# Altium PCB ALCT_MEZ_LX150T.PcbDoc (part 1 of 9)
Units mil, origin at the board's own origin, x right, y up, seen from the top; angles counter-clockwise.
Board outline 4101.98 x 5875.01 mil, 12 copper layers (Top Layer, Mid-Layer 1, +3V3, Mid-Layer 2, +1V2, Mid-Layer 4, +2V5, Mid-Layer 5, GND1, Mid-Layer 7, GND2, Bottom Layer), stack 64.7 mil thick; 378 components, 616 nets, 2492 pads, 1686 vias.
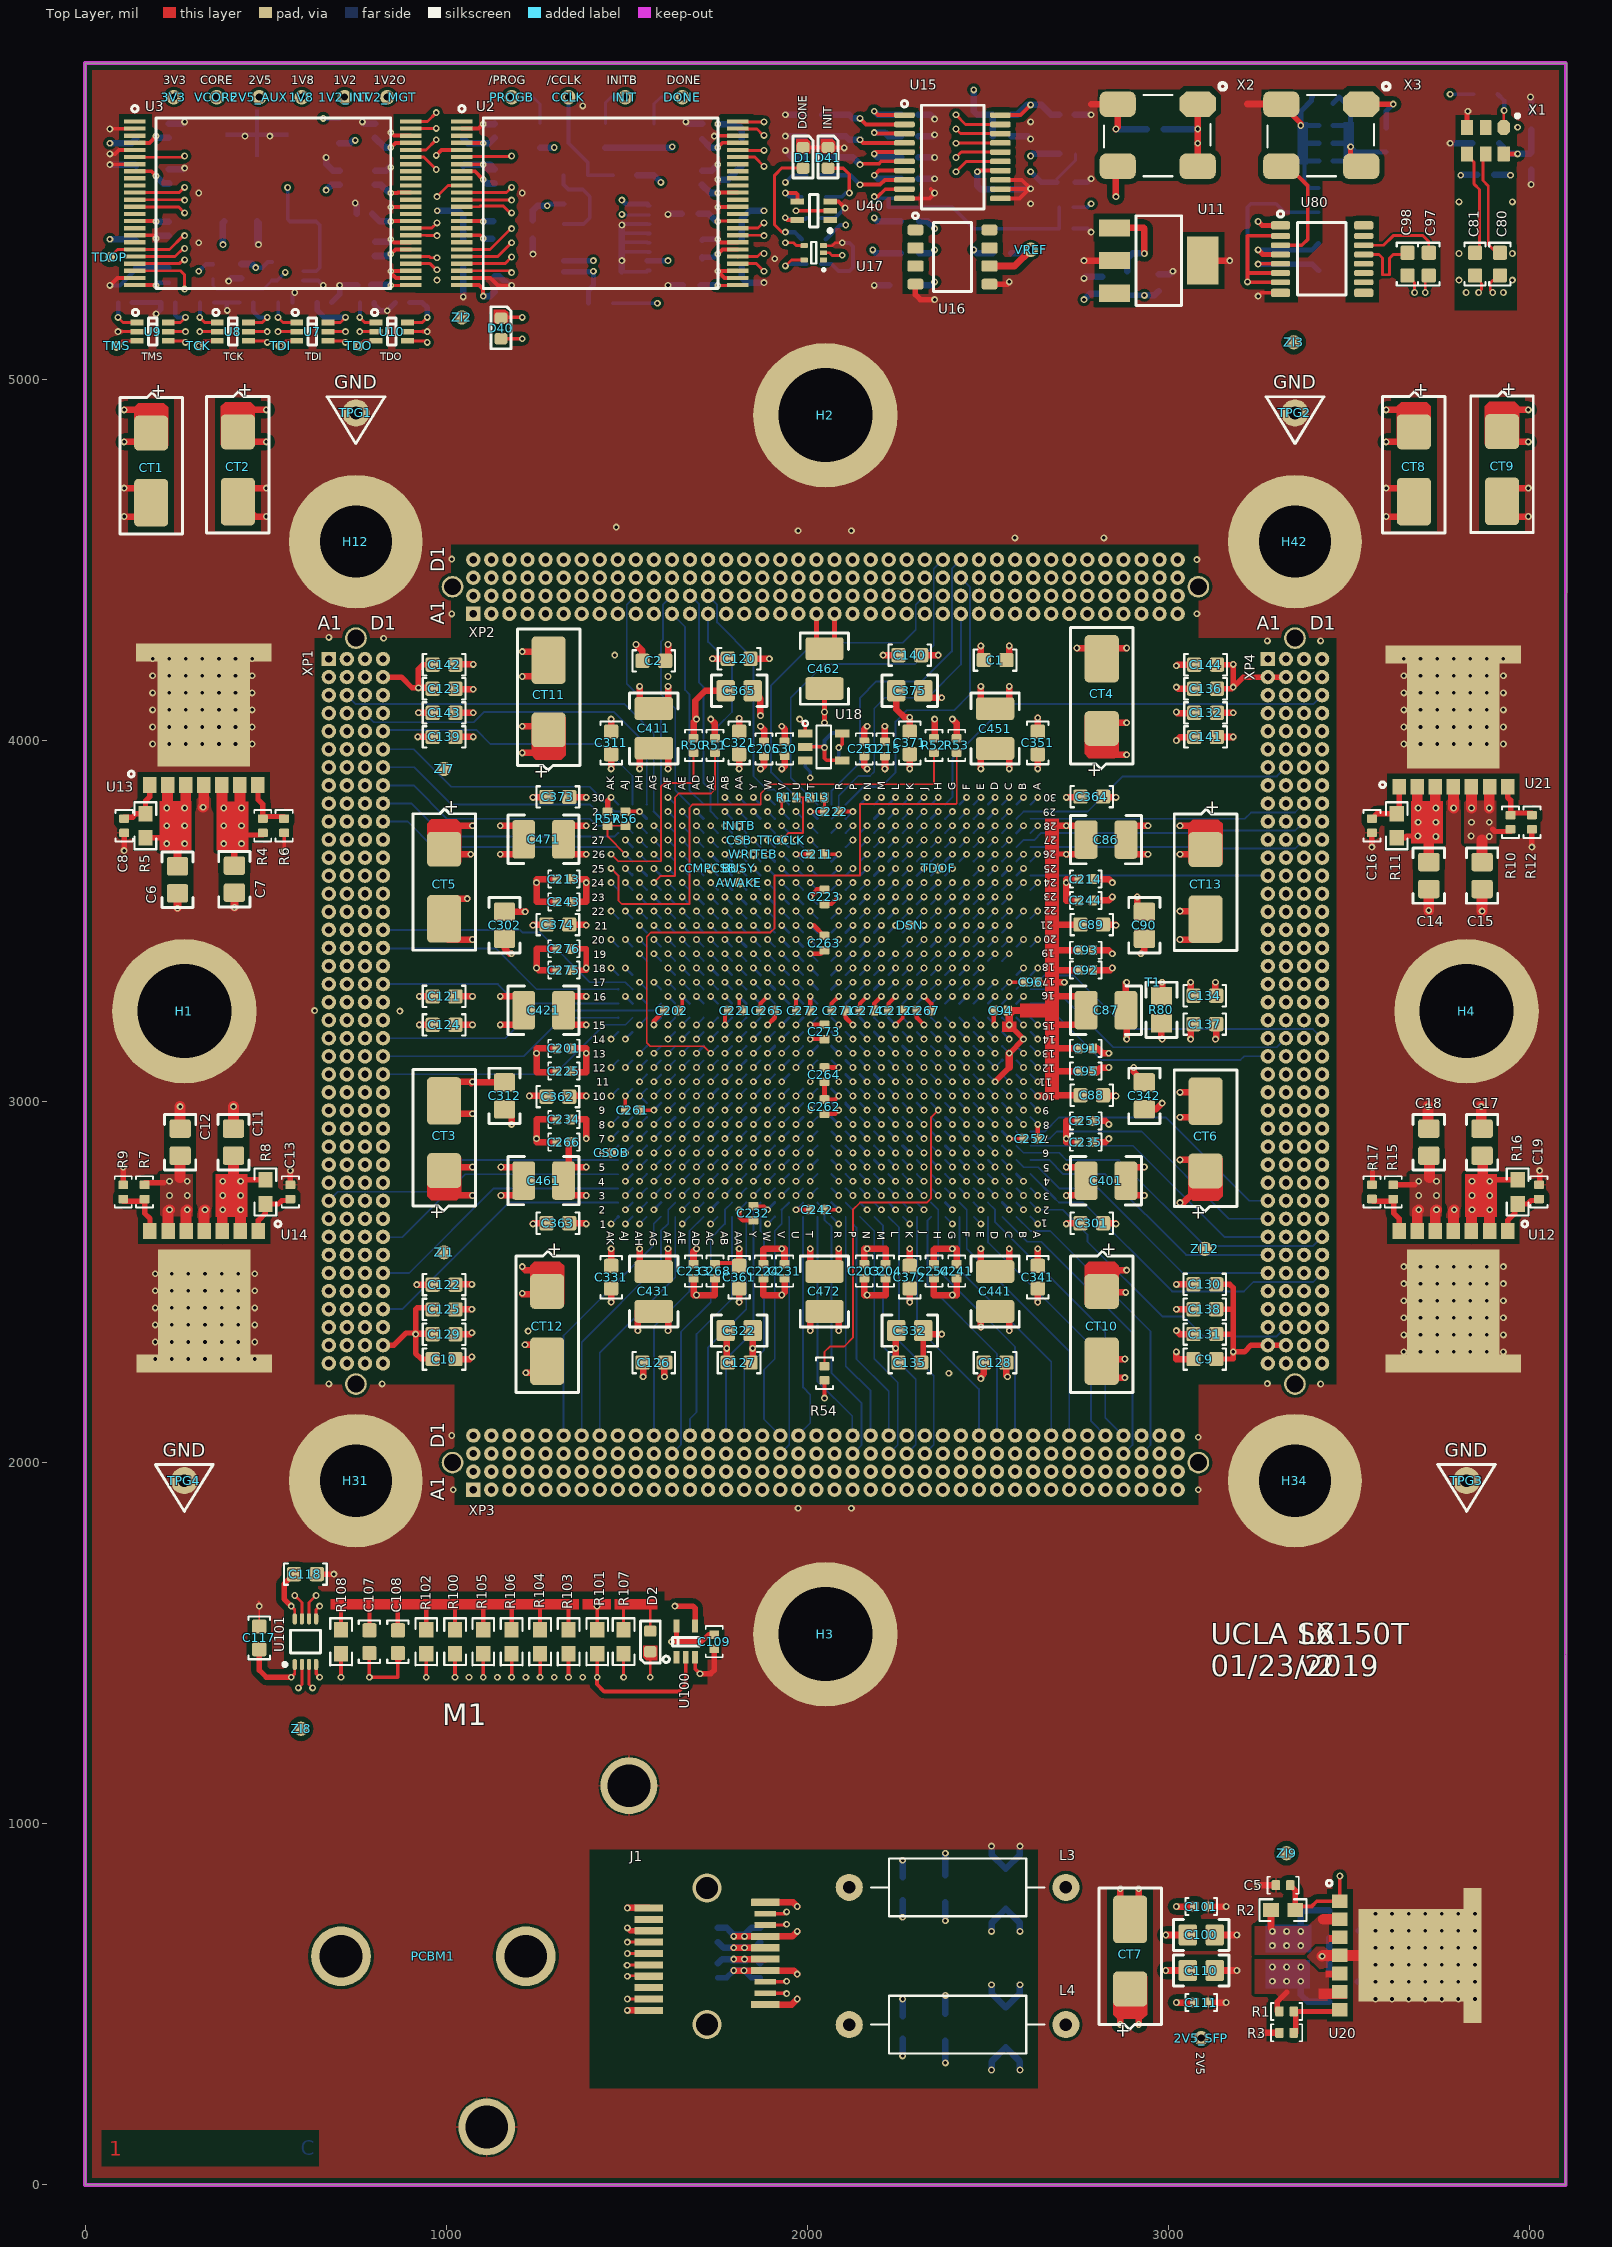
[diagram p0: Top Layer view]
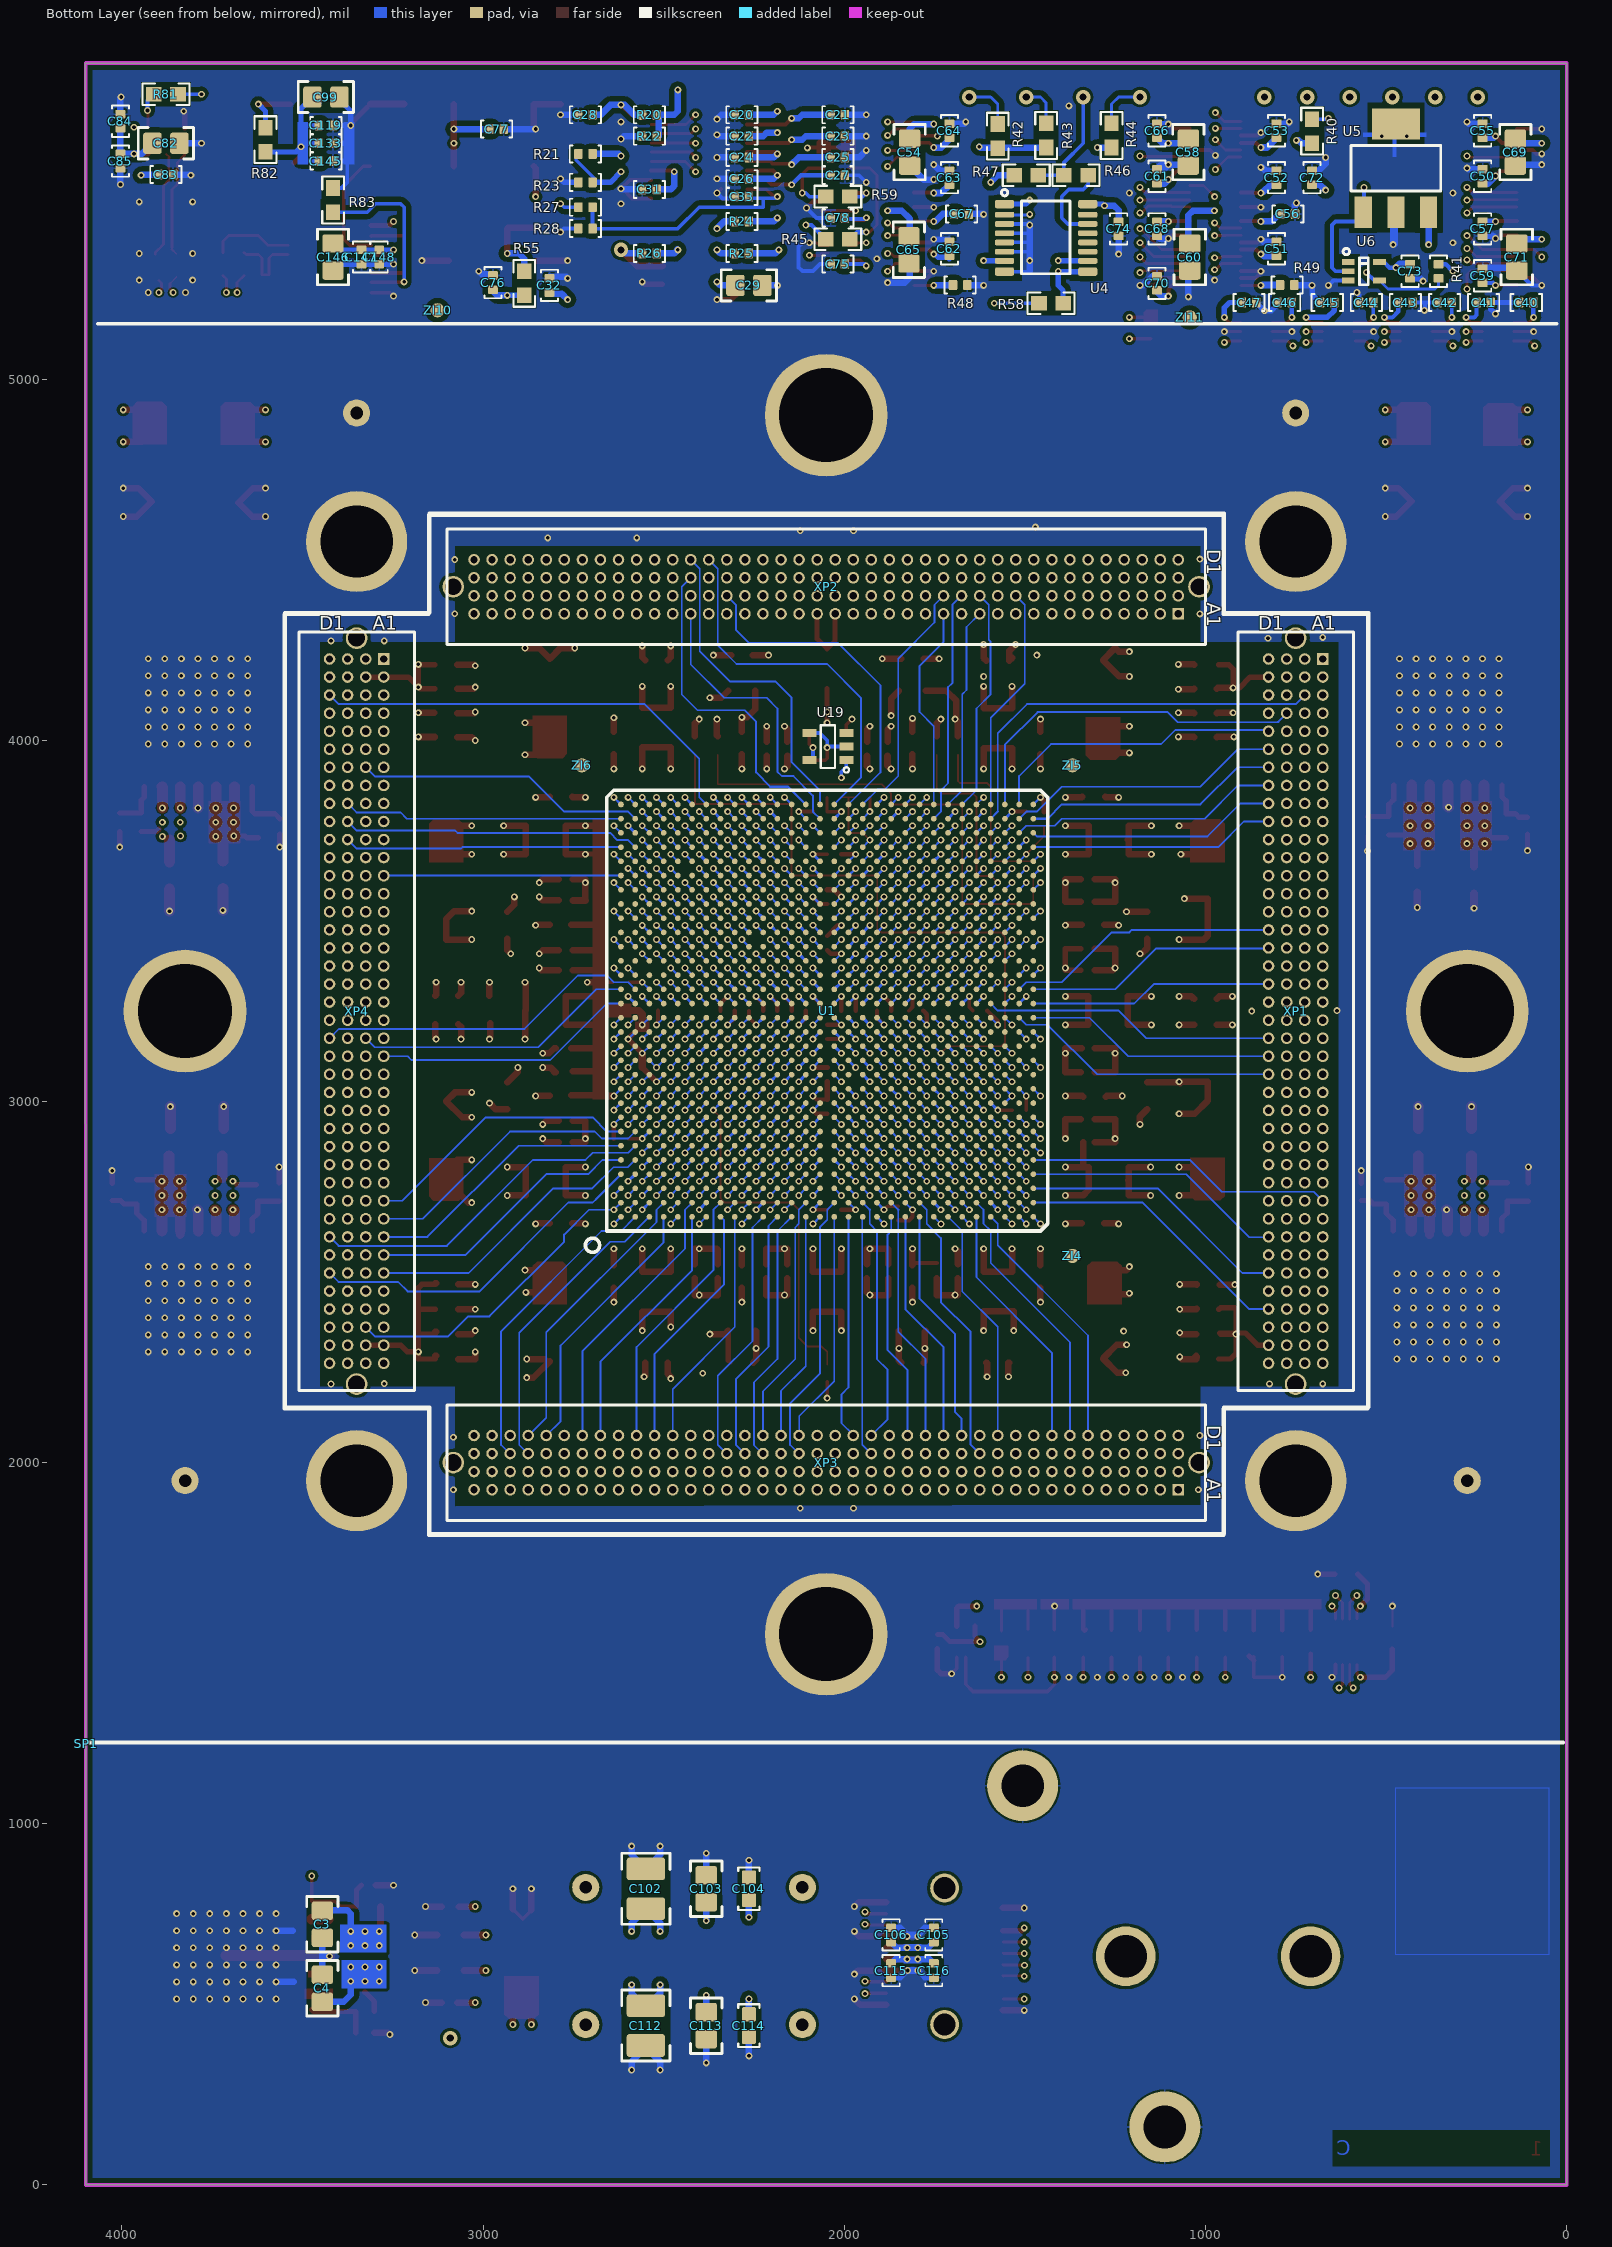
[diagram p1: Bottom Layer view, seen from below]
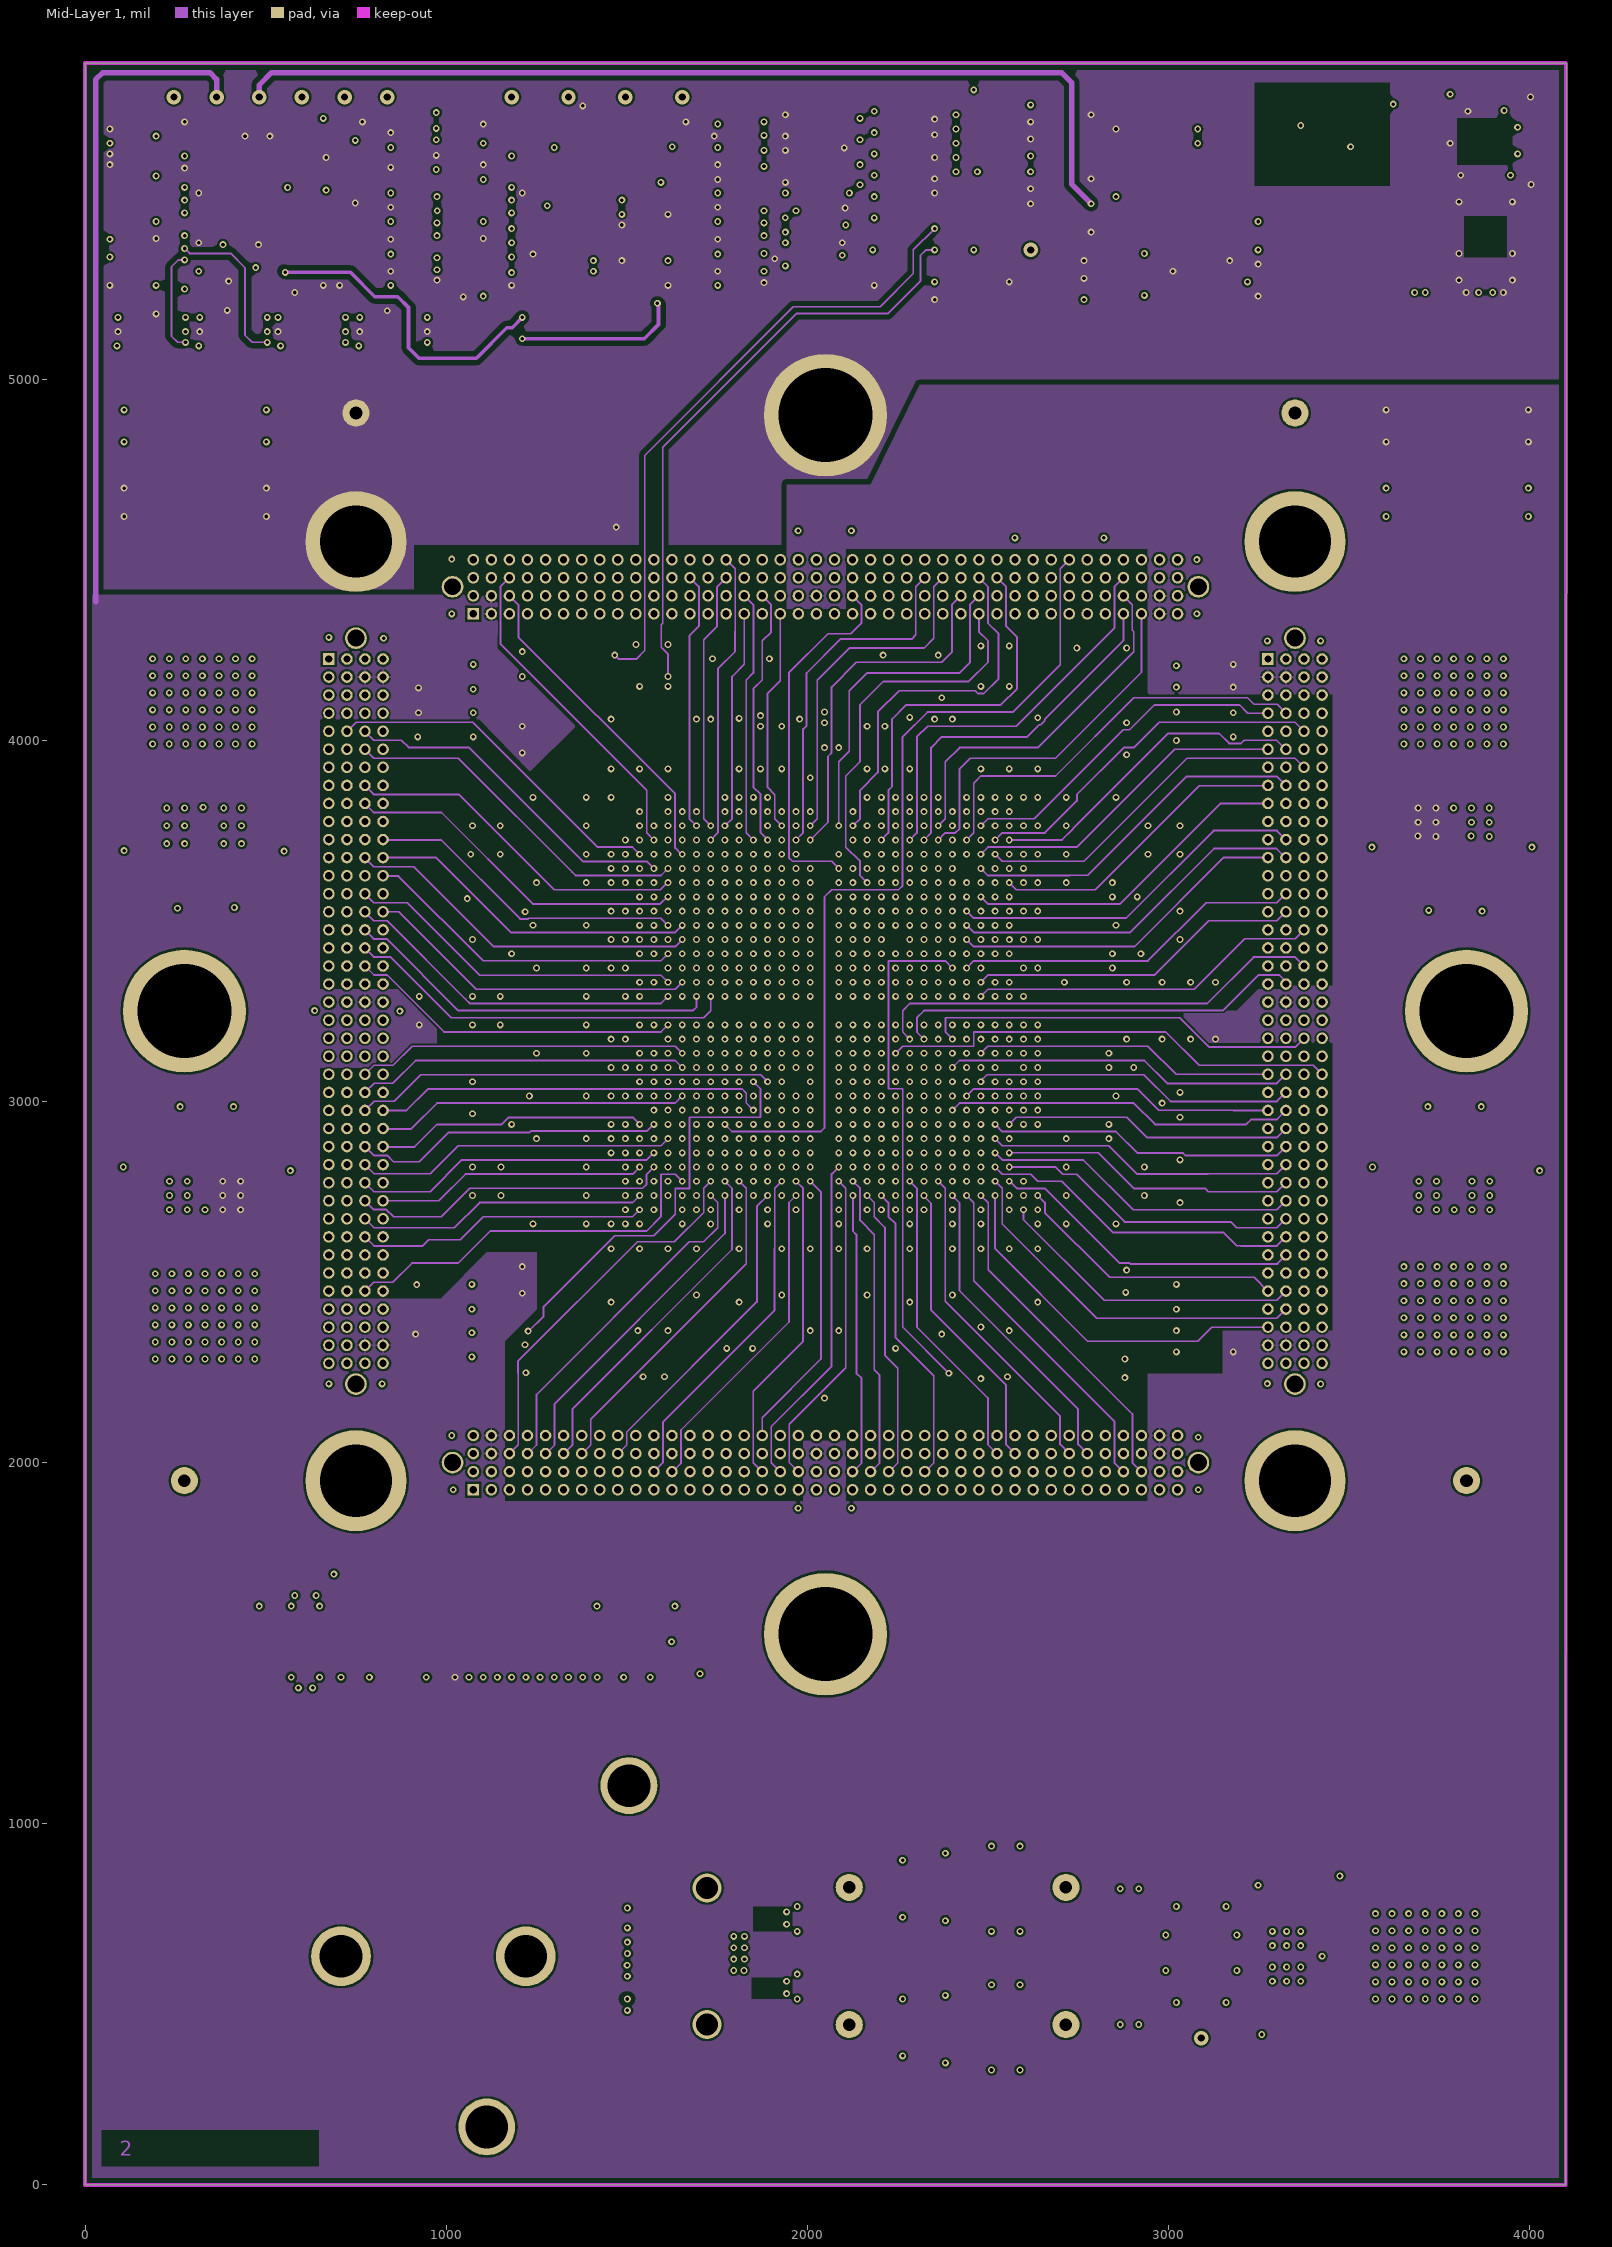
[diagram p2: Mid-Layer 1]
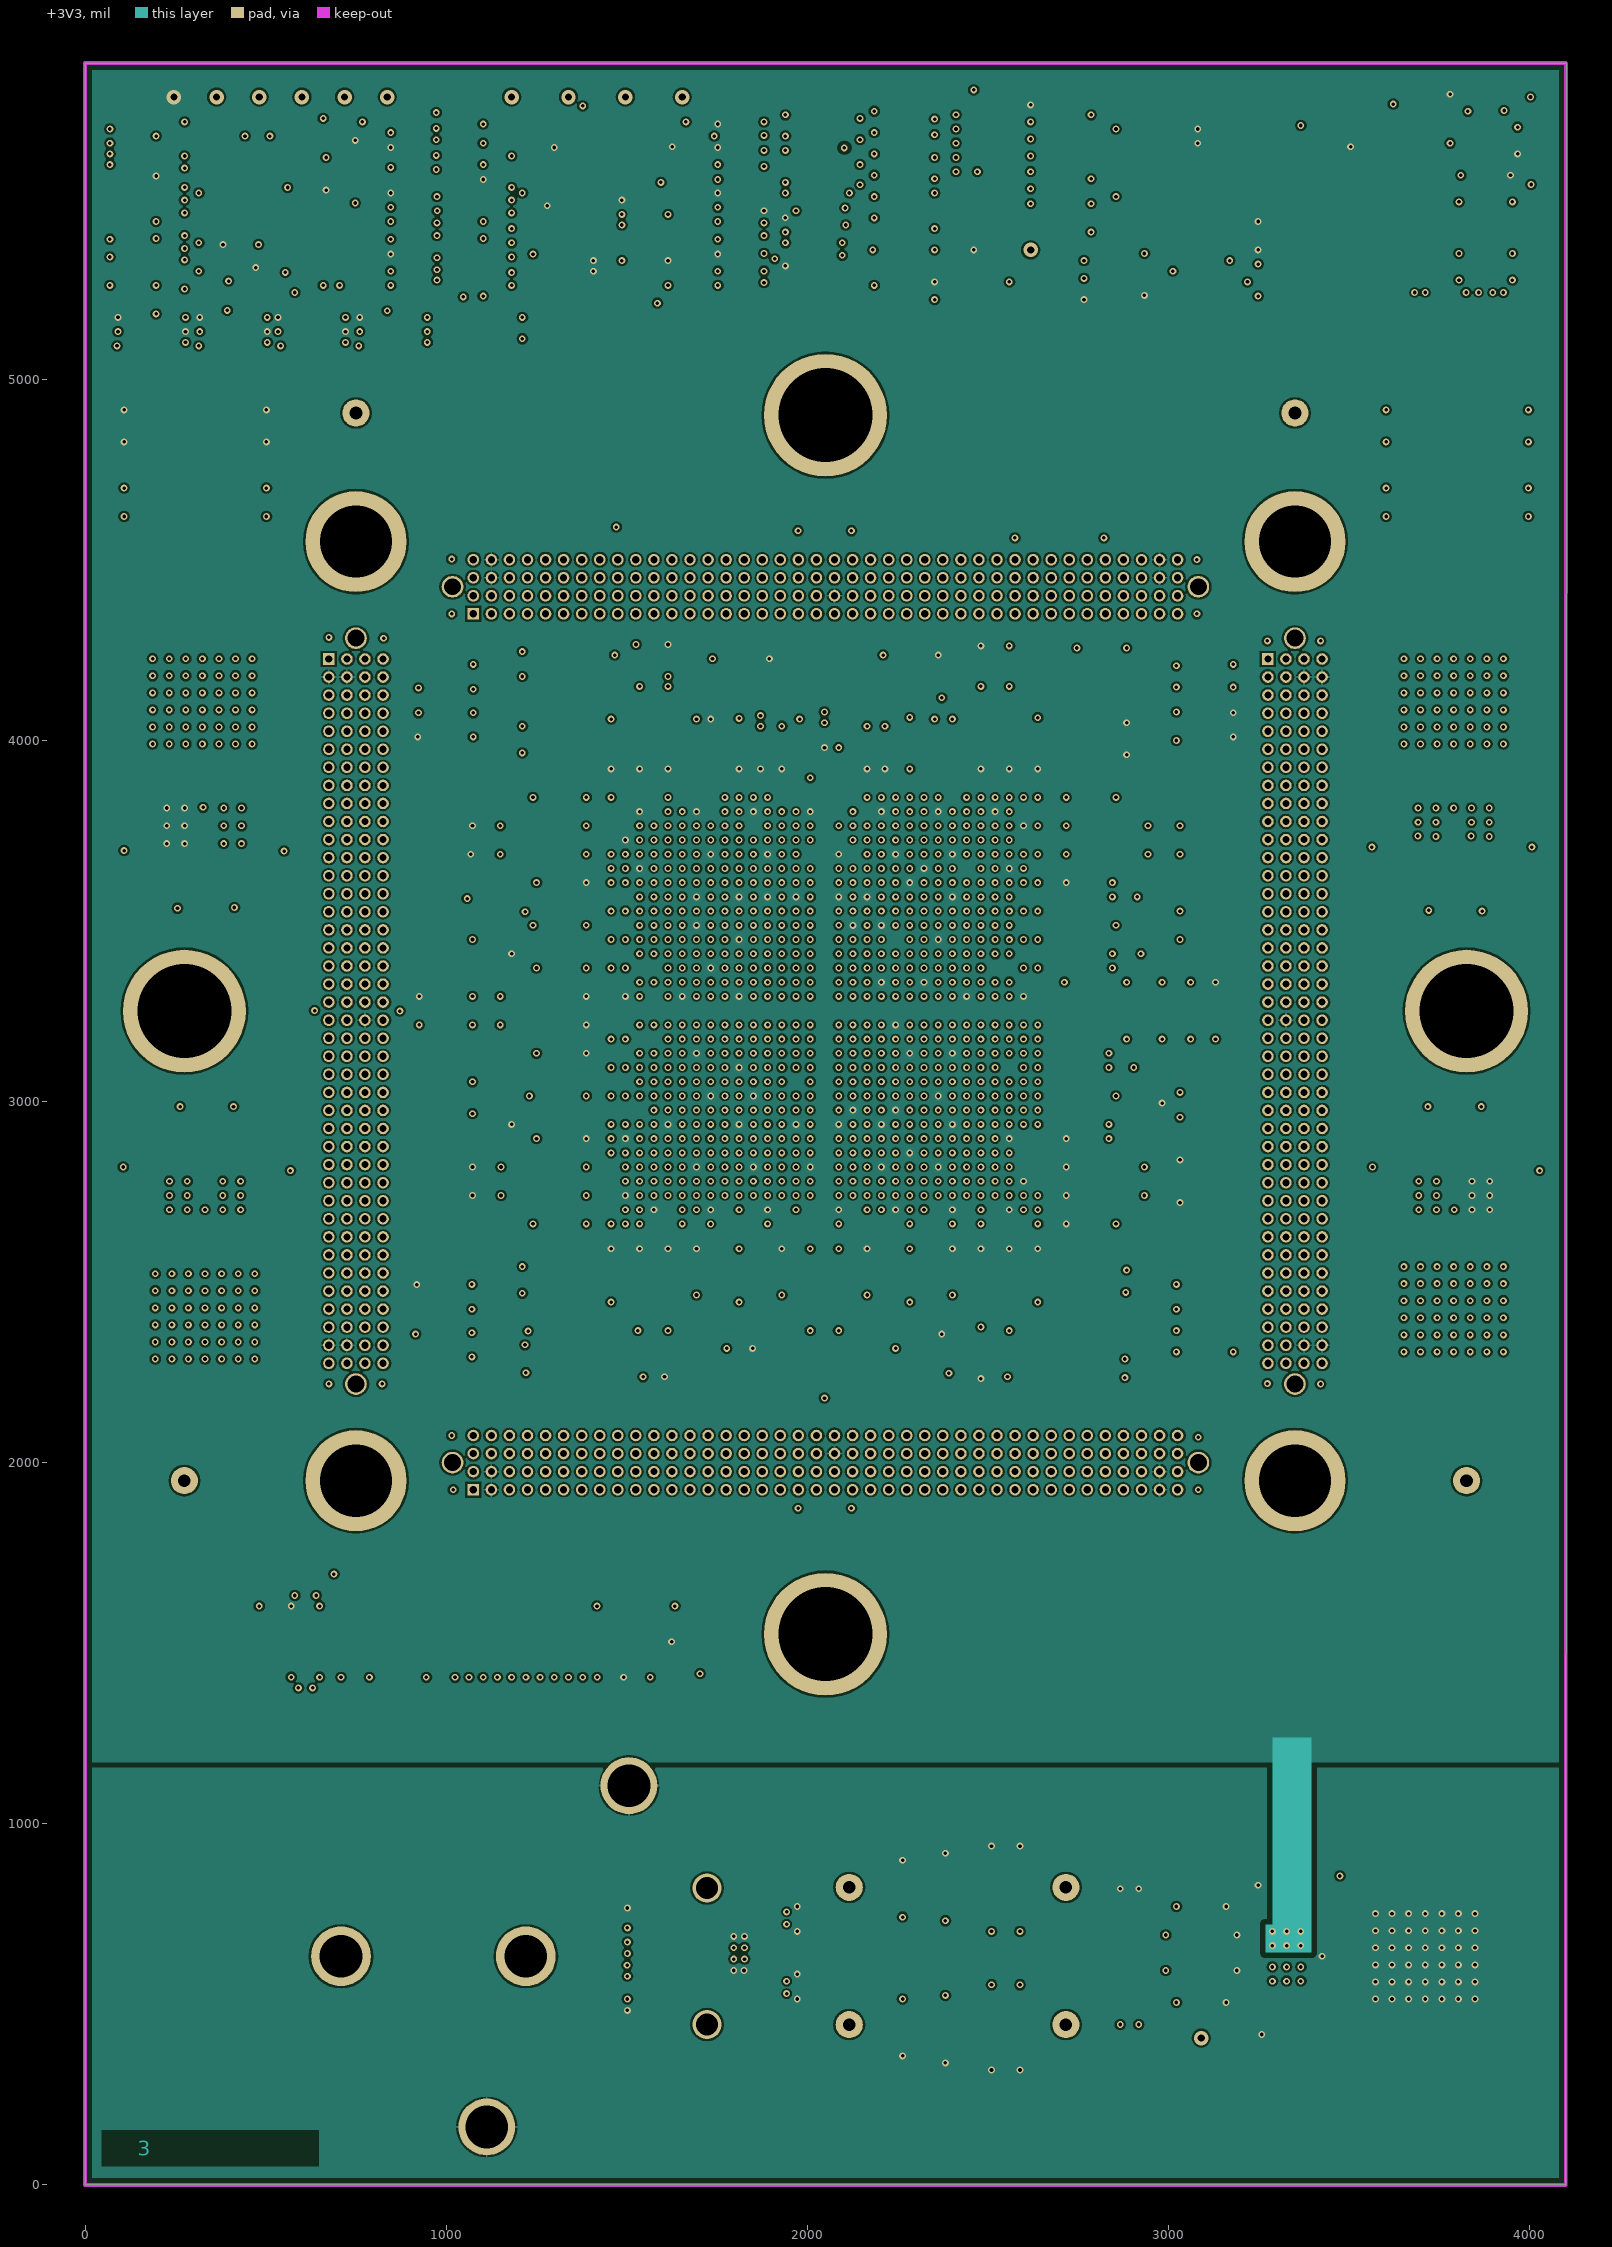
[diagram p3: +3V3]
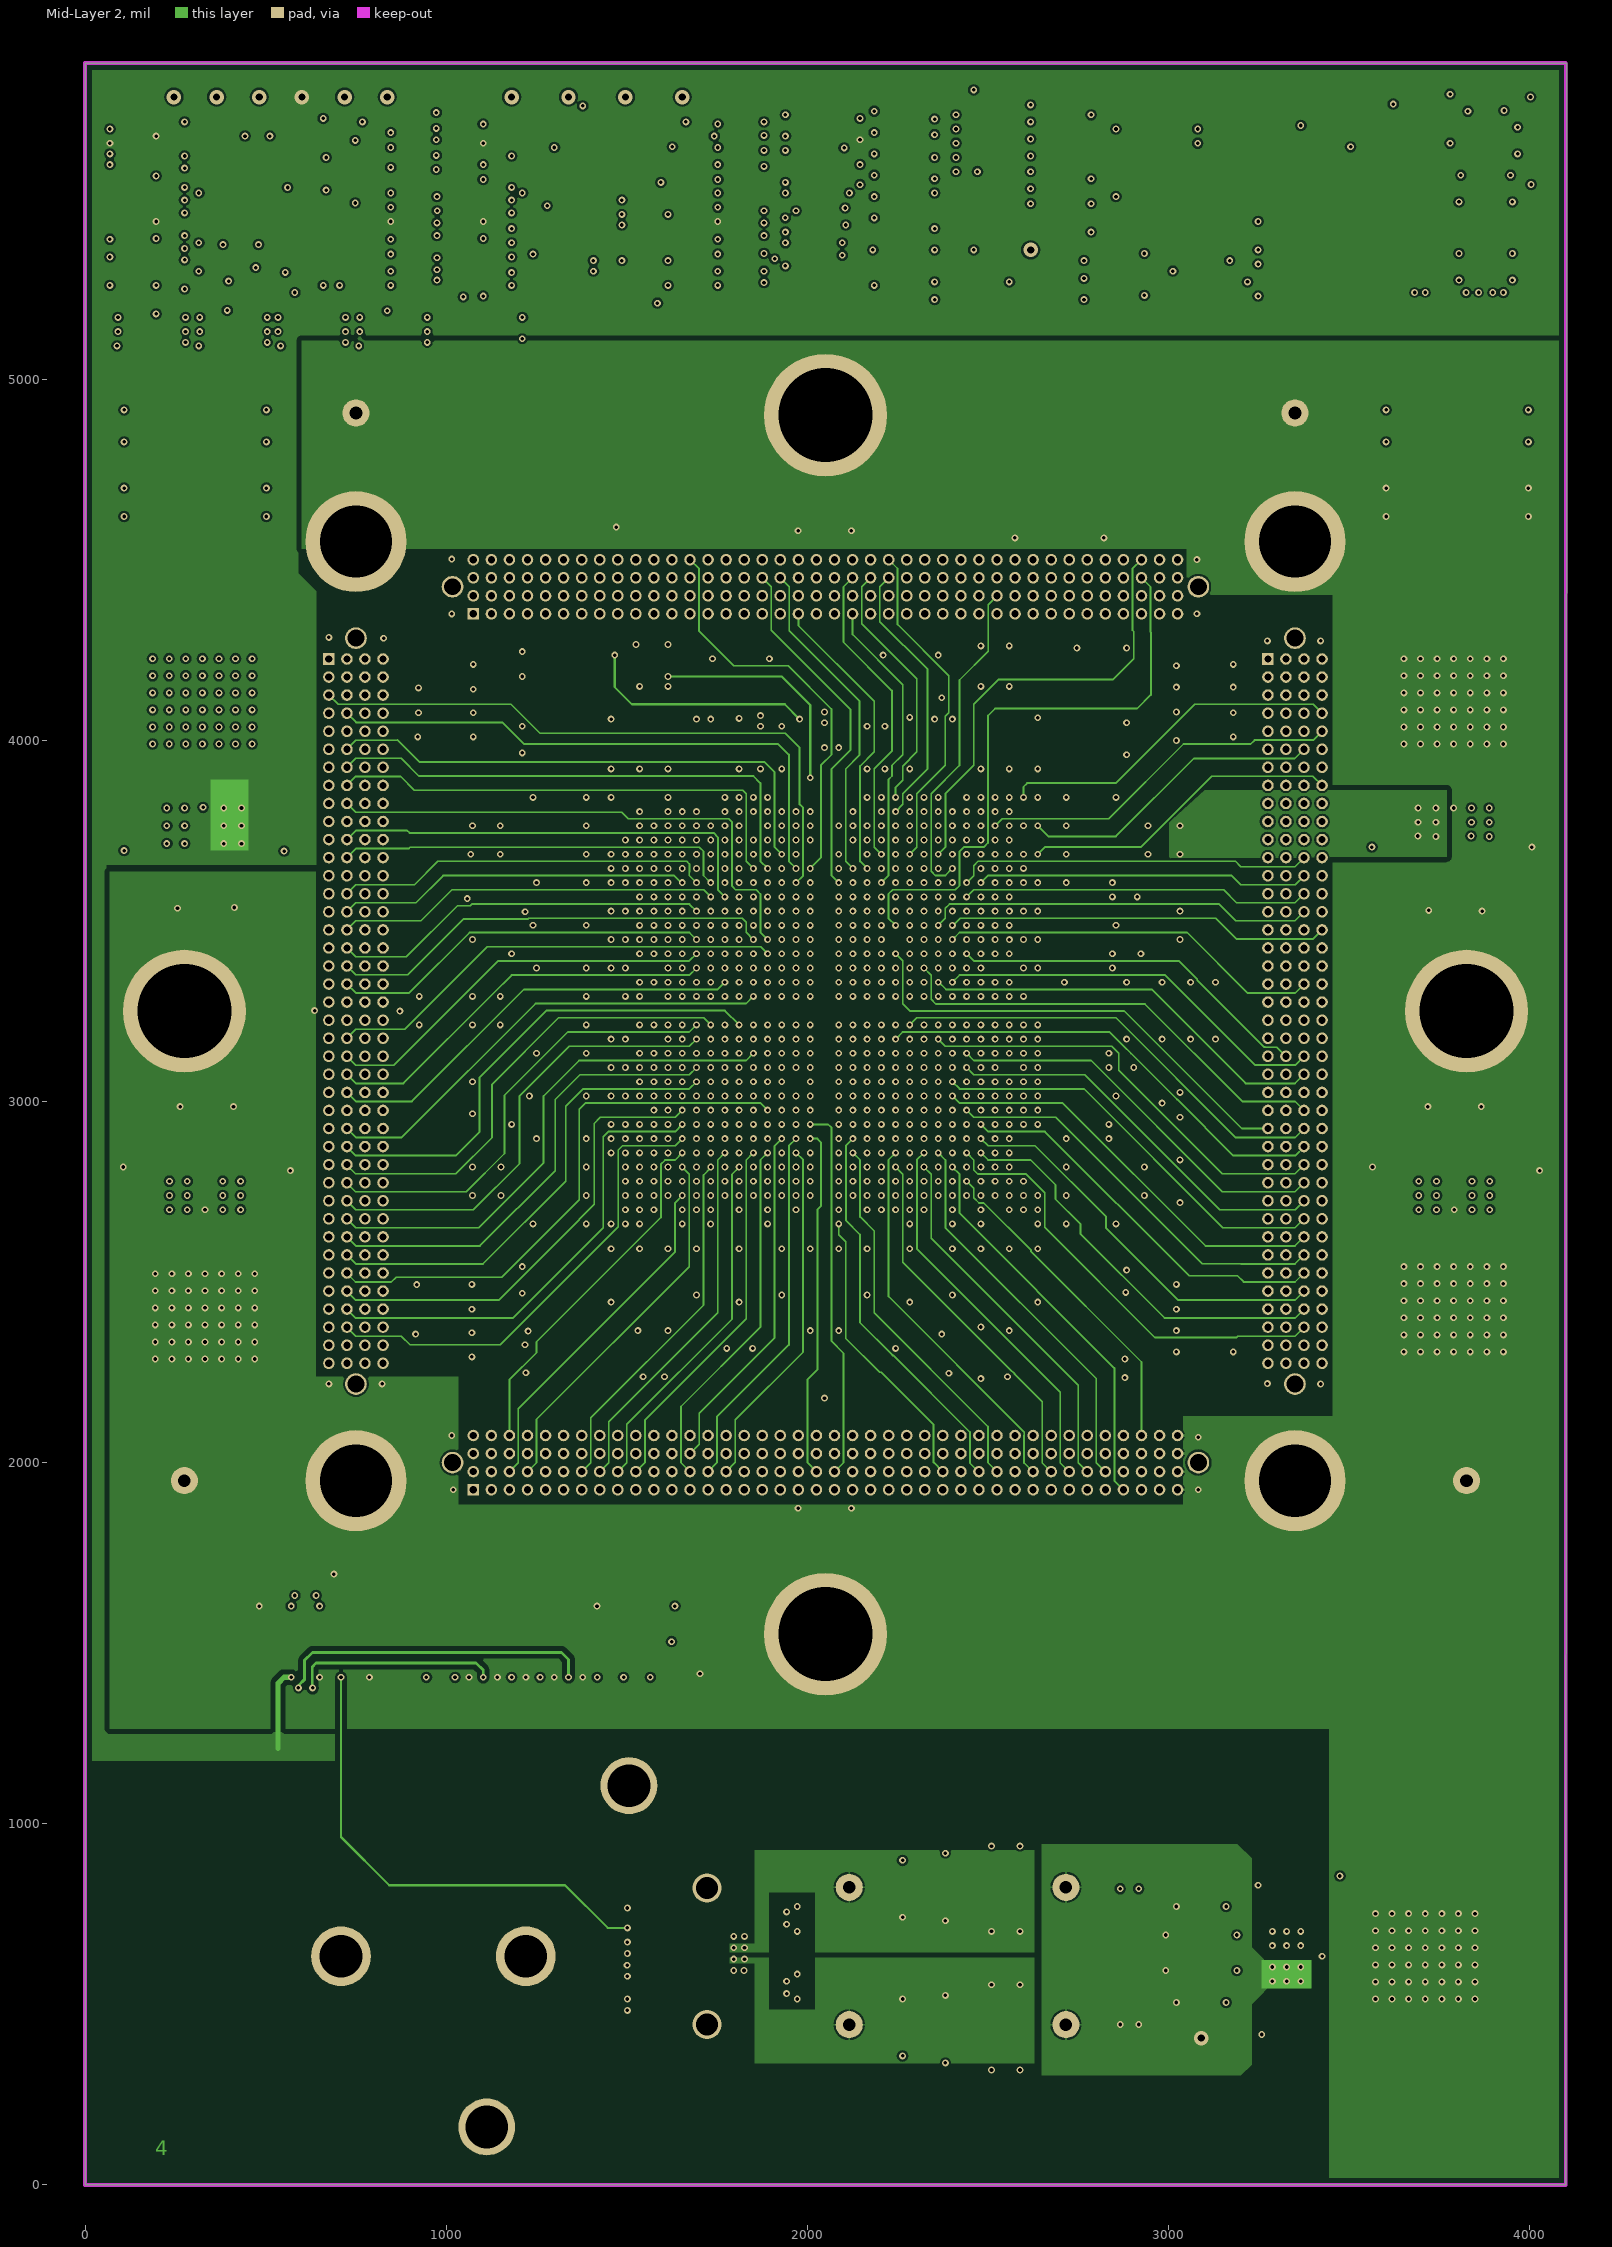
[diagram p4: Mid-Layer 2]
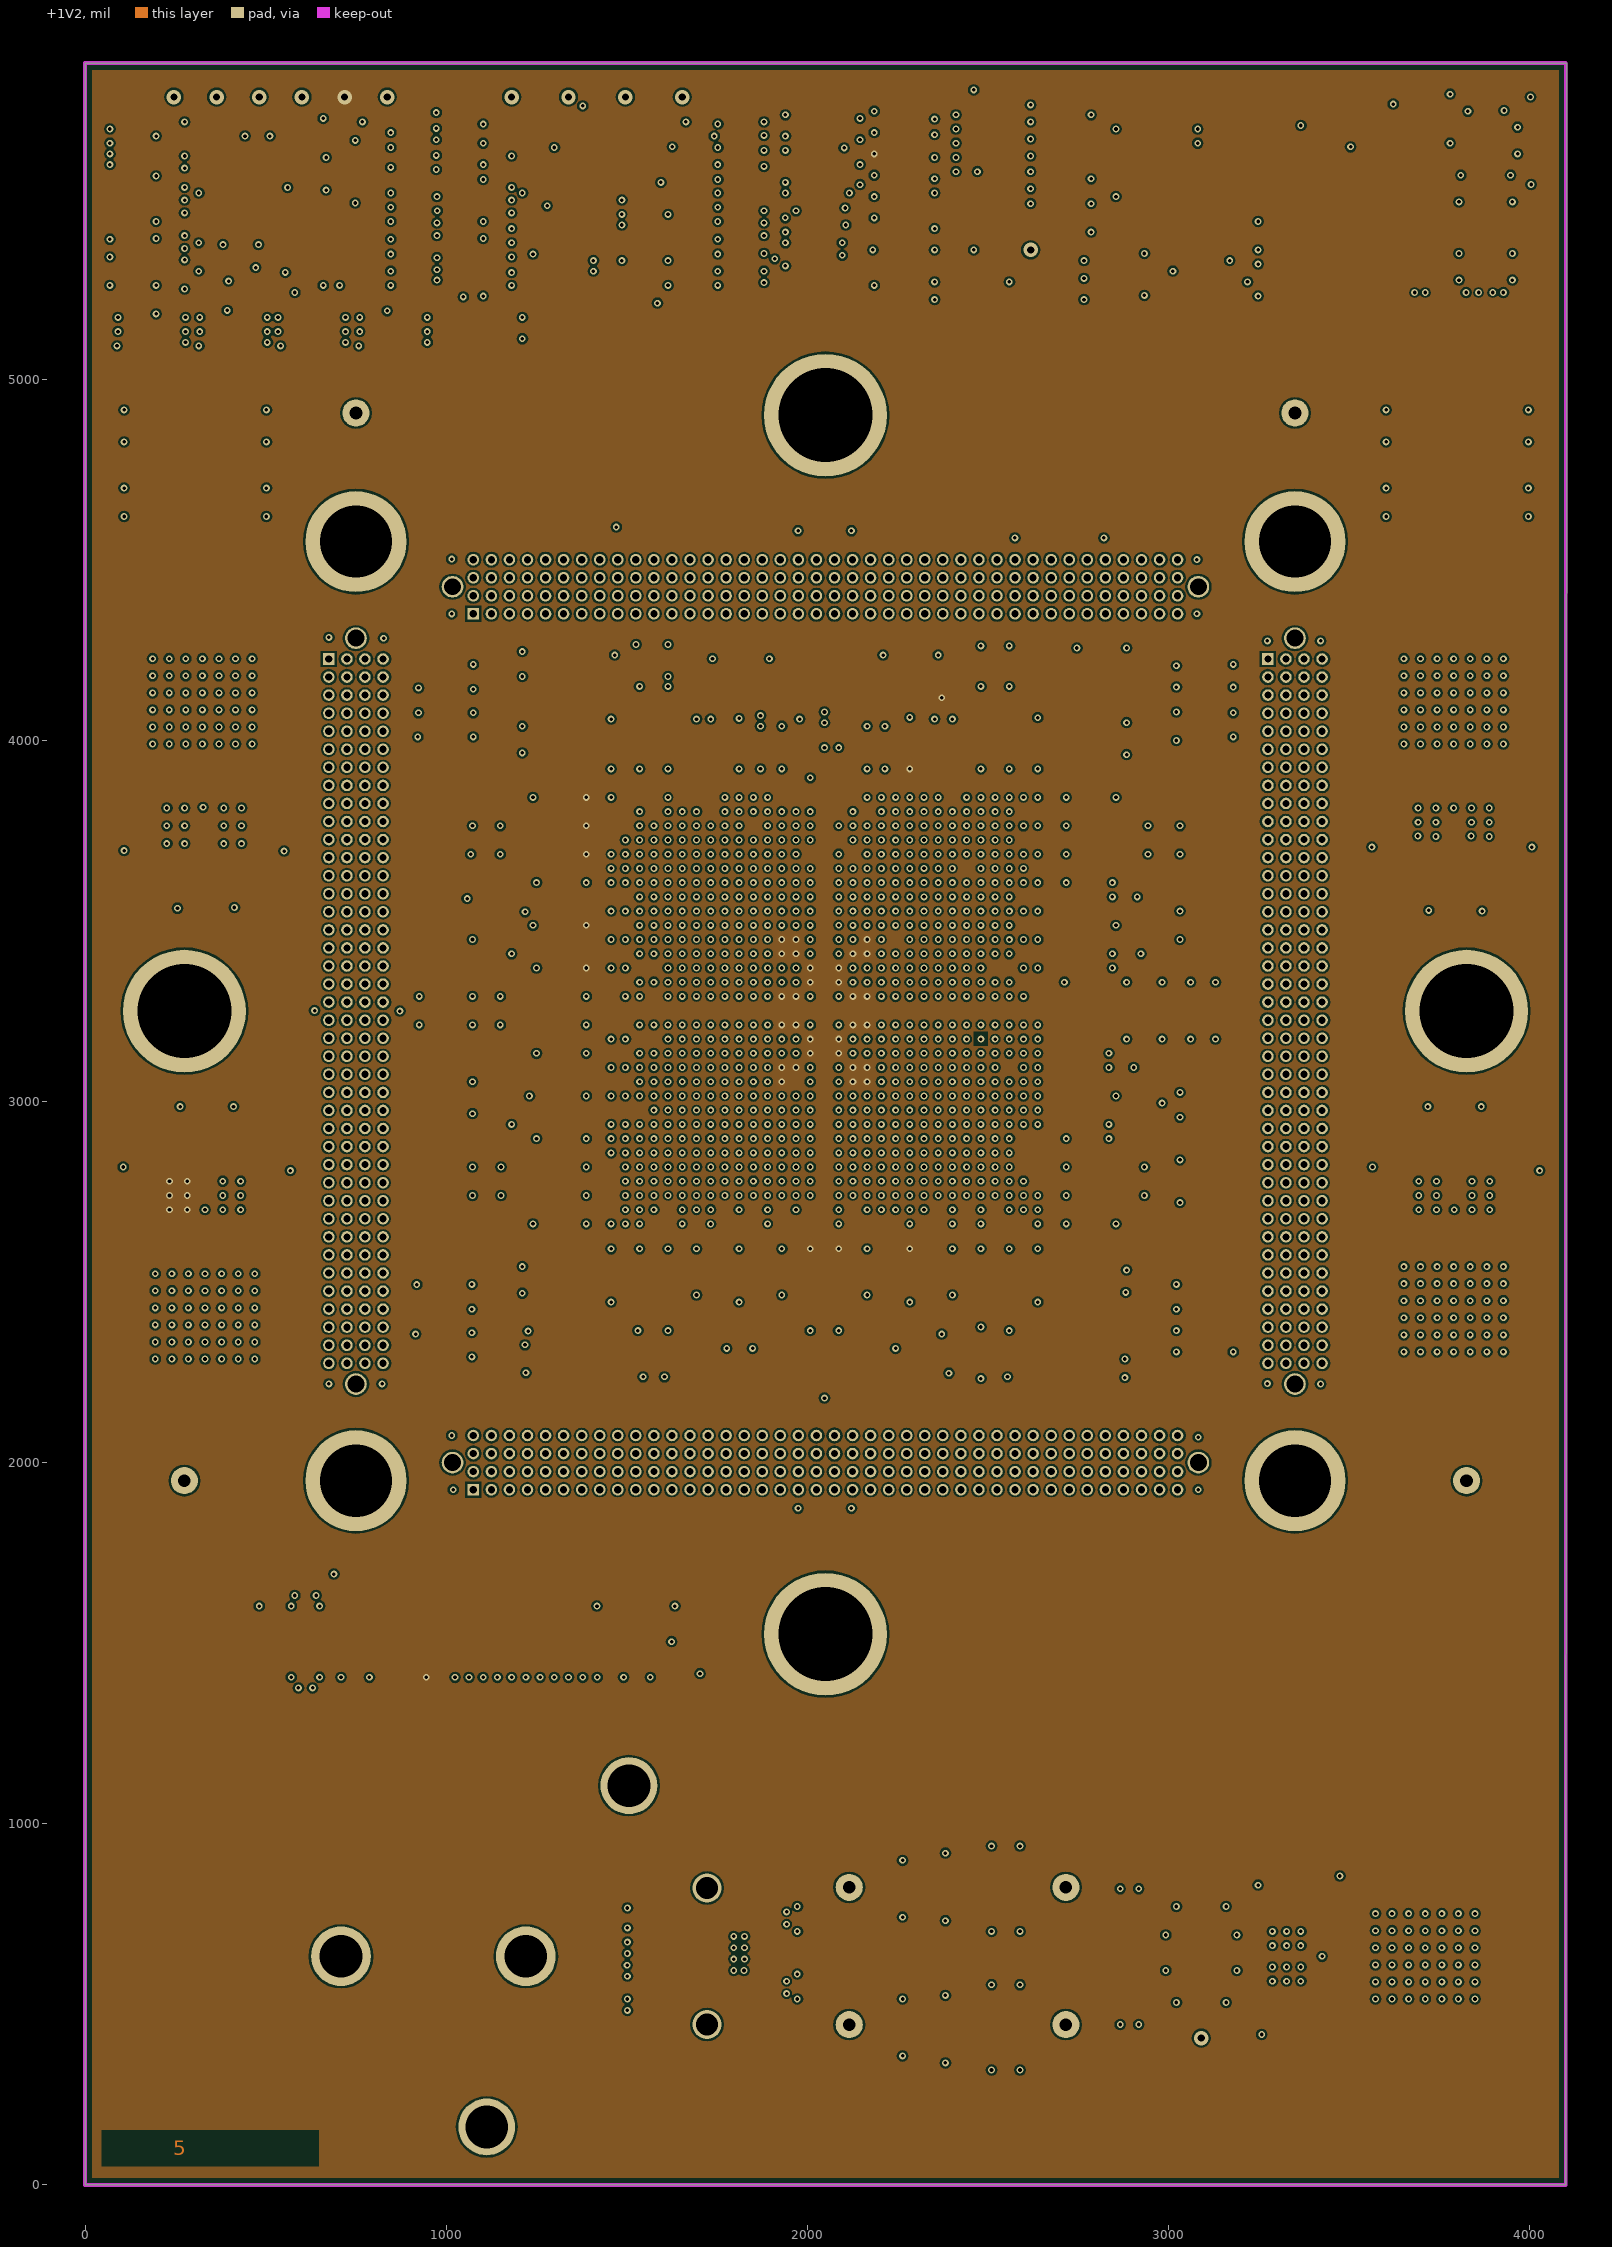
[diagram p5: +1V2]
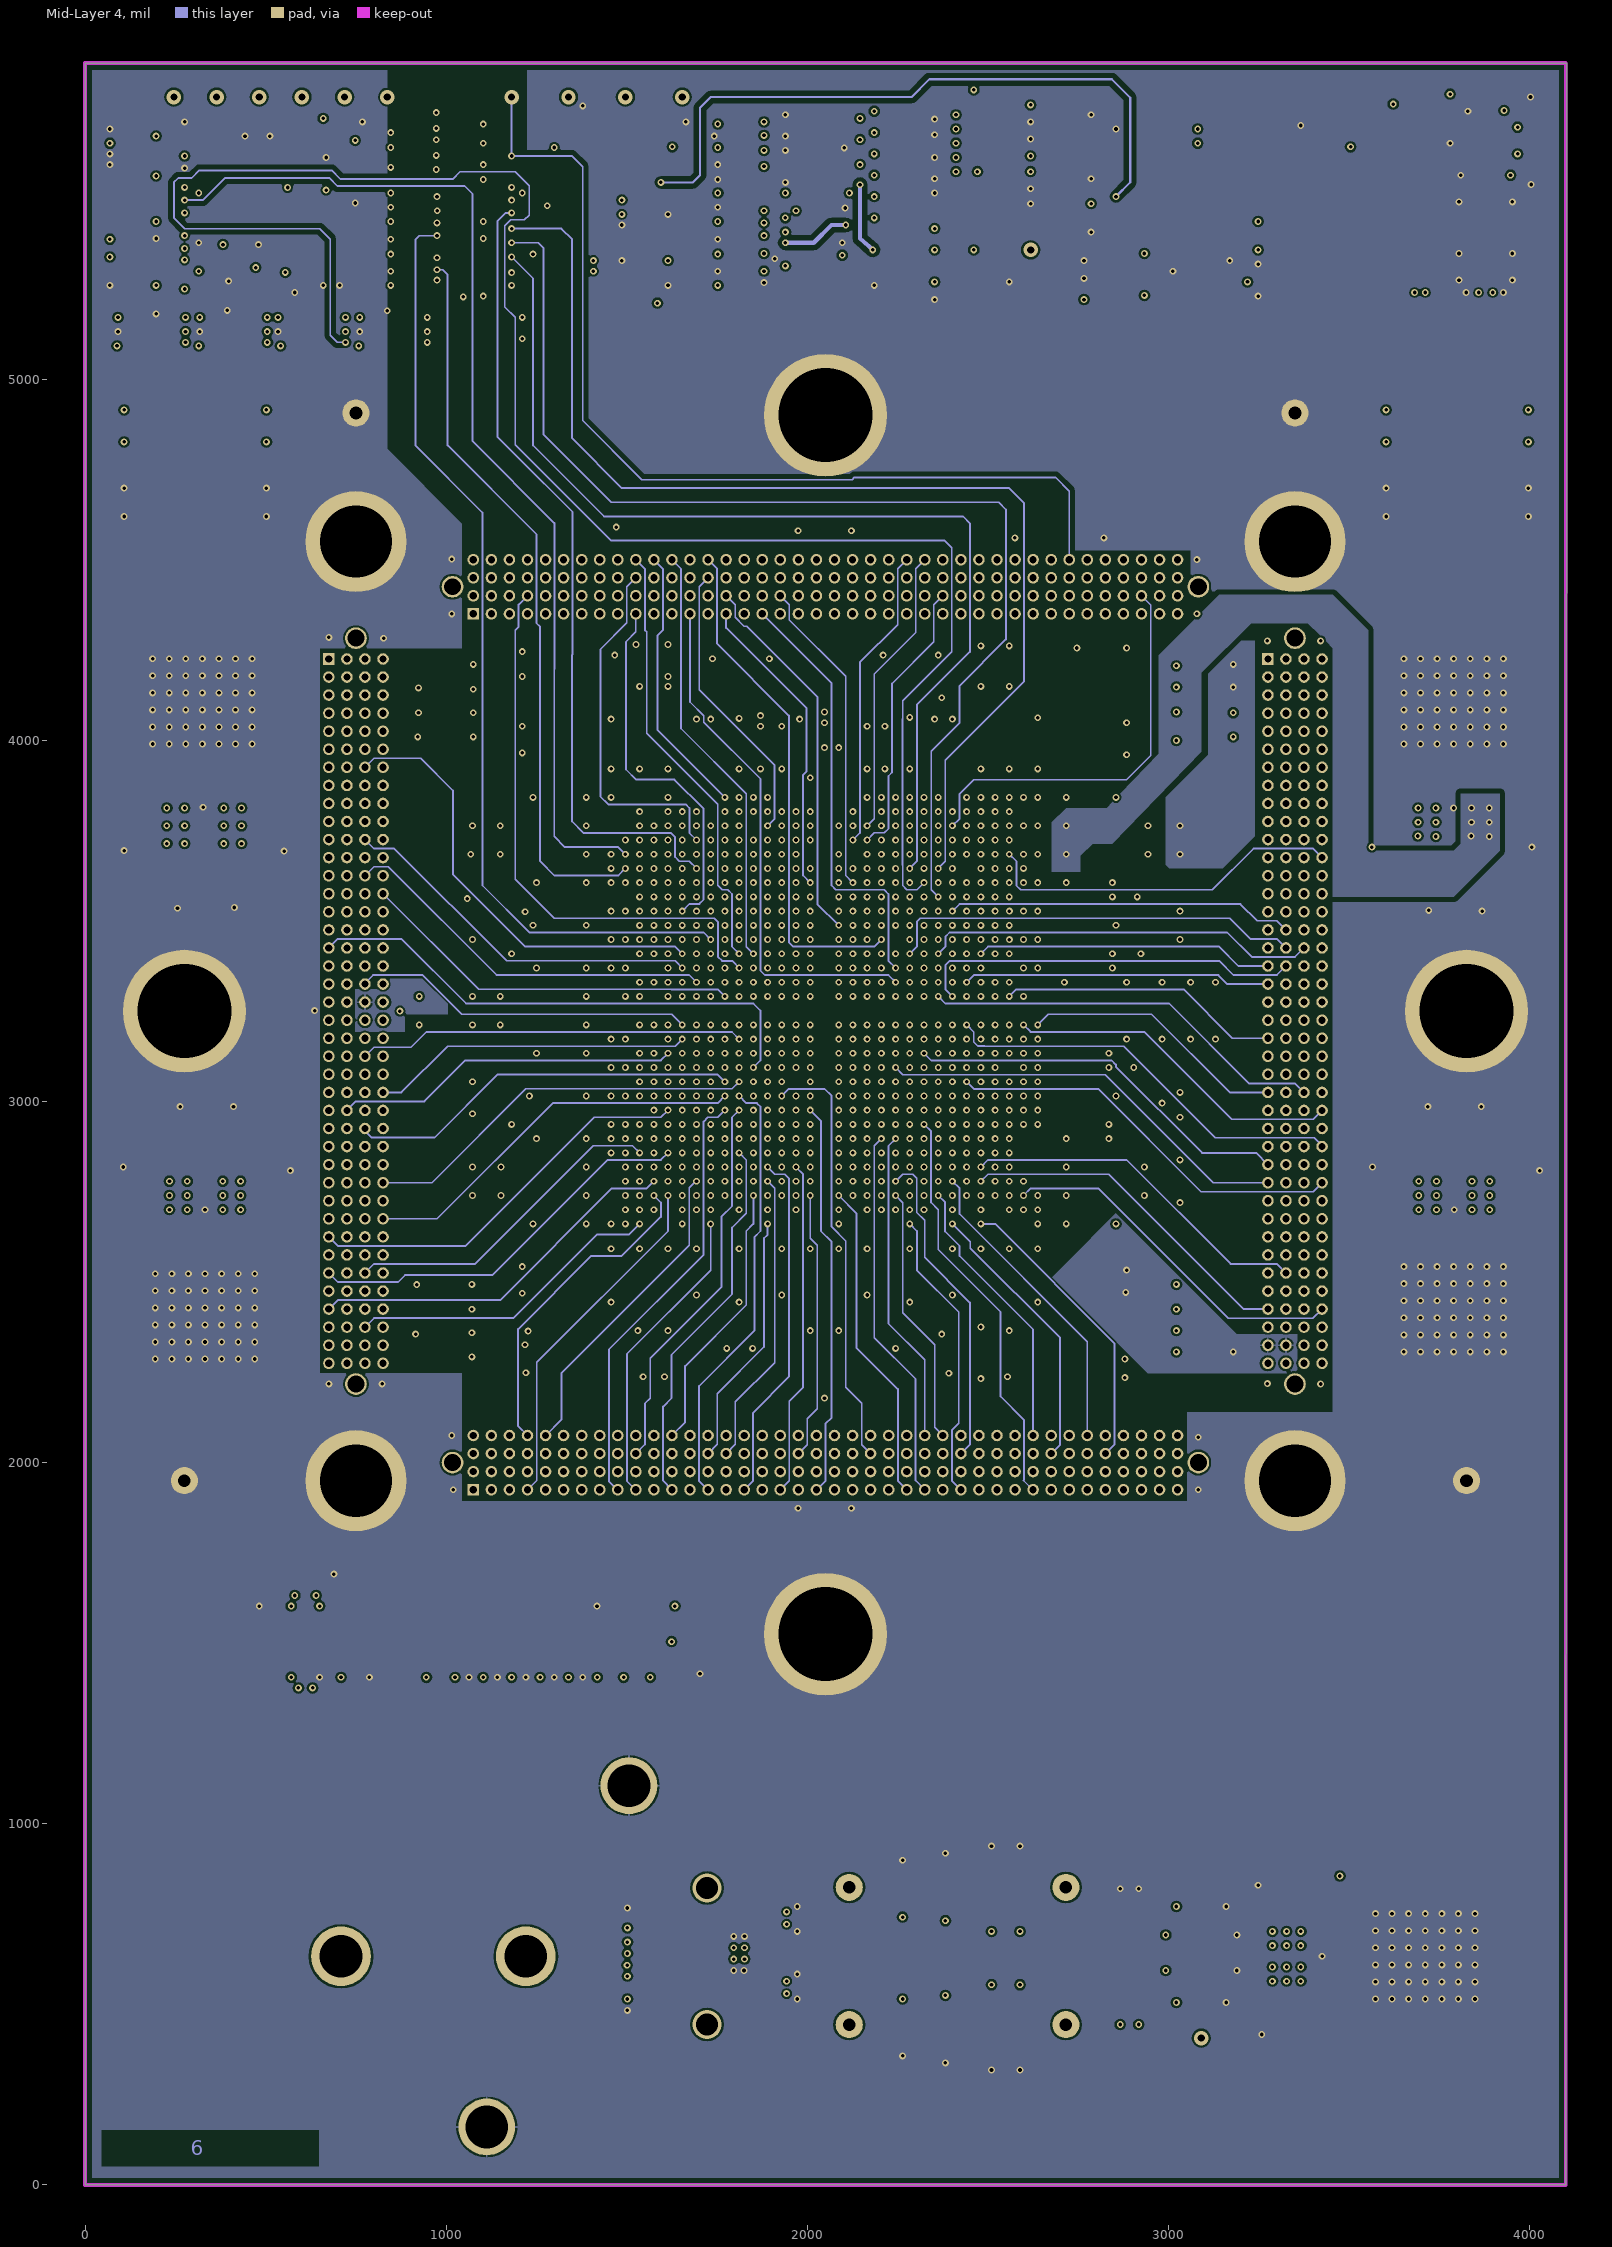
[diagram p6: Mid-Layer 4]
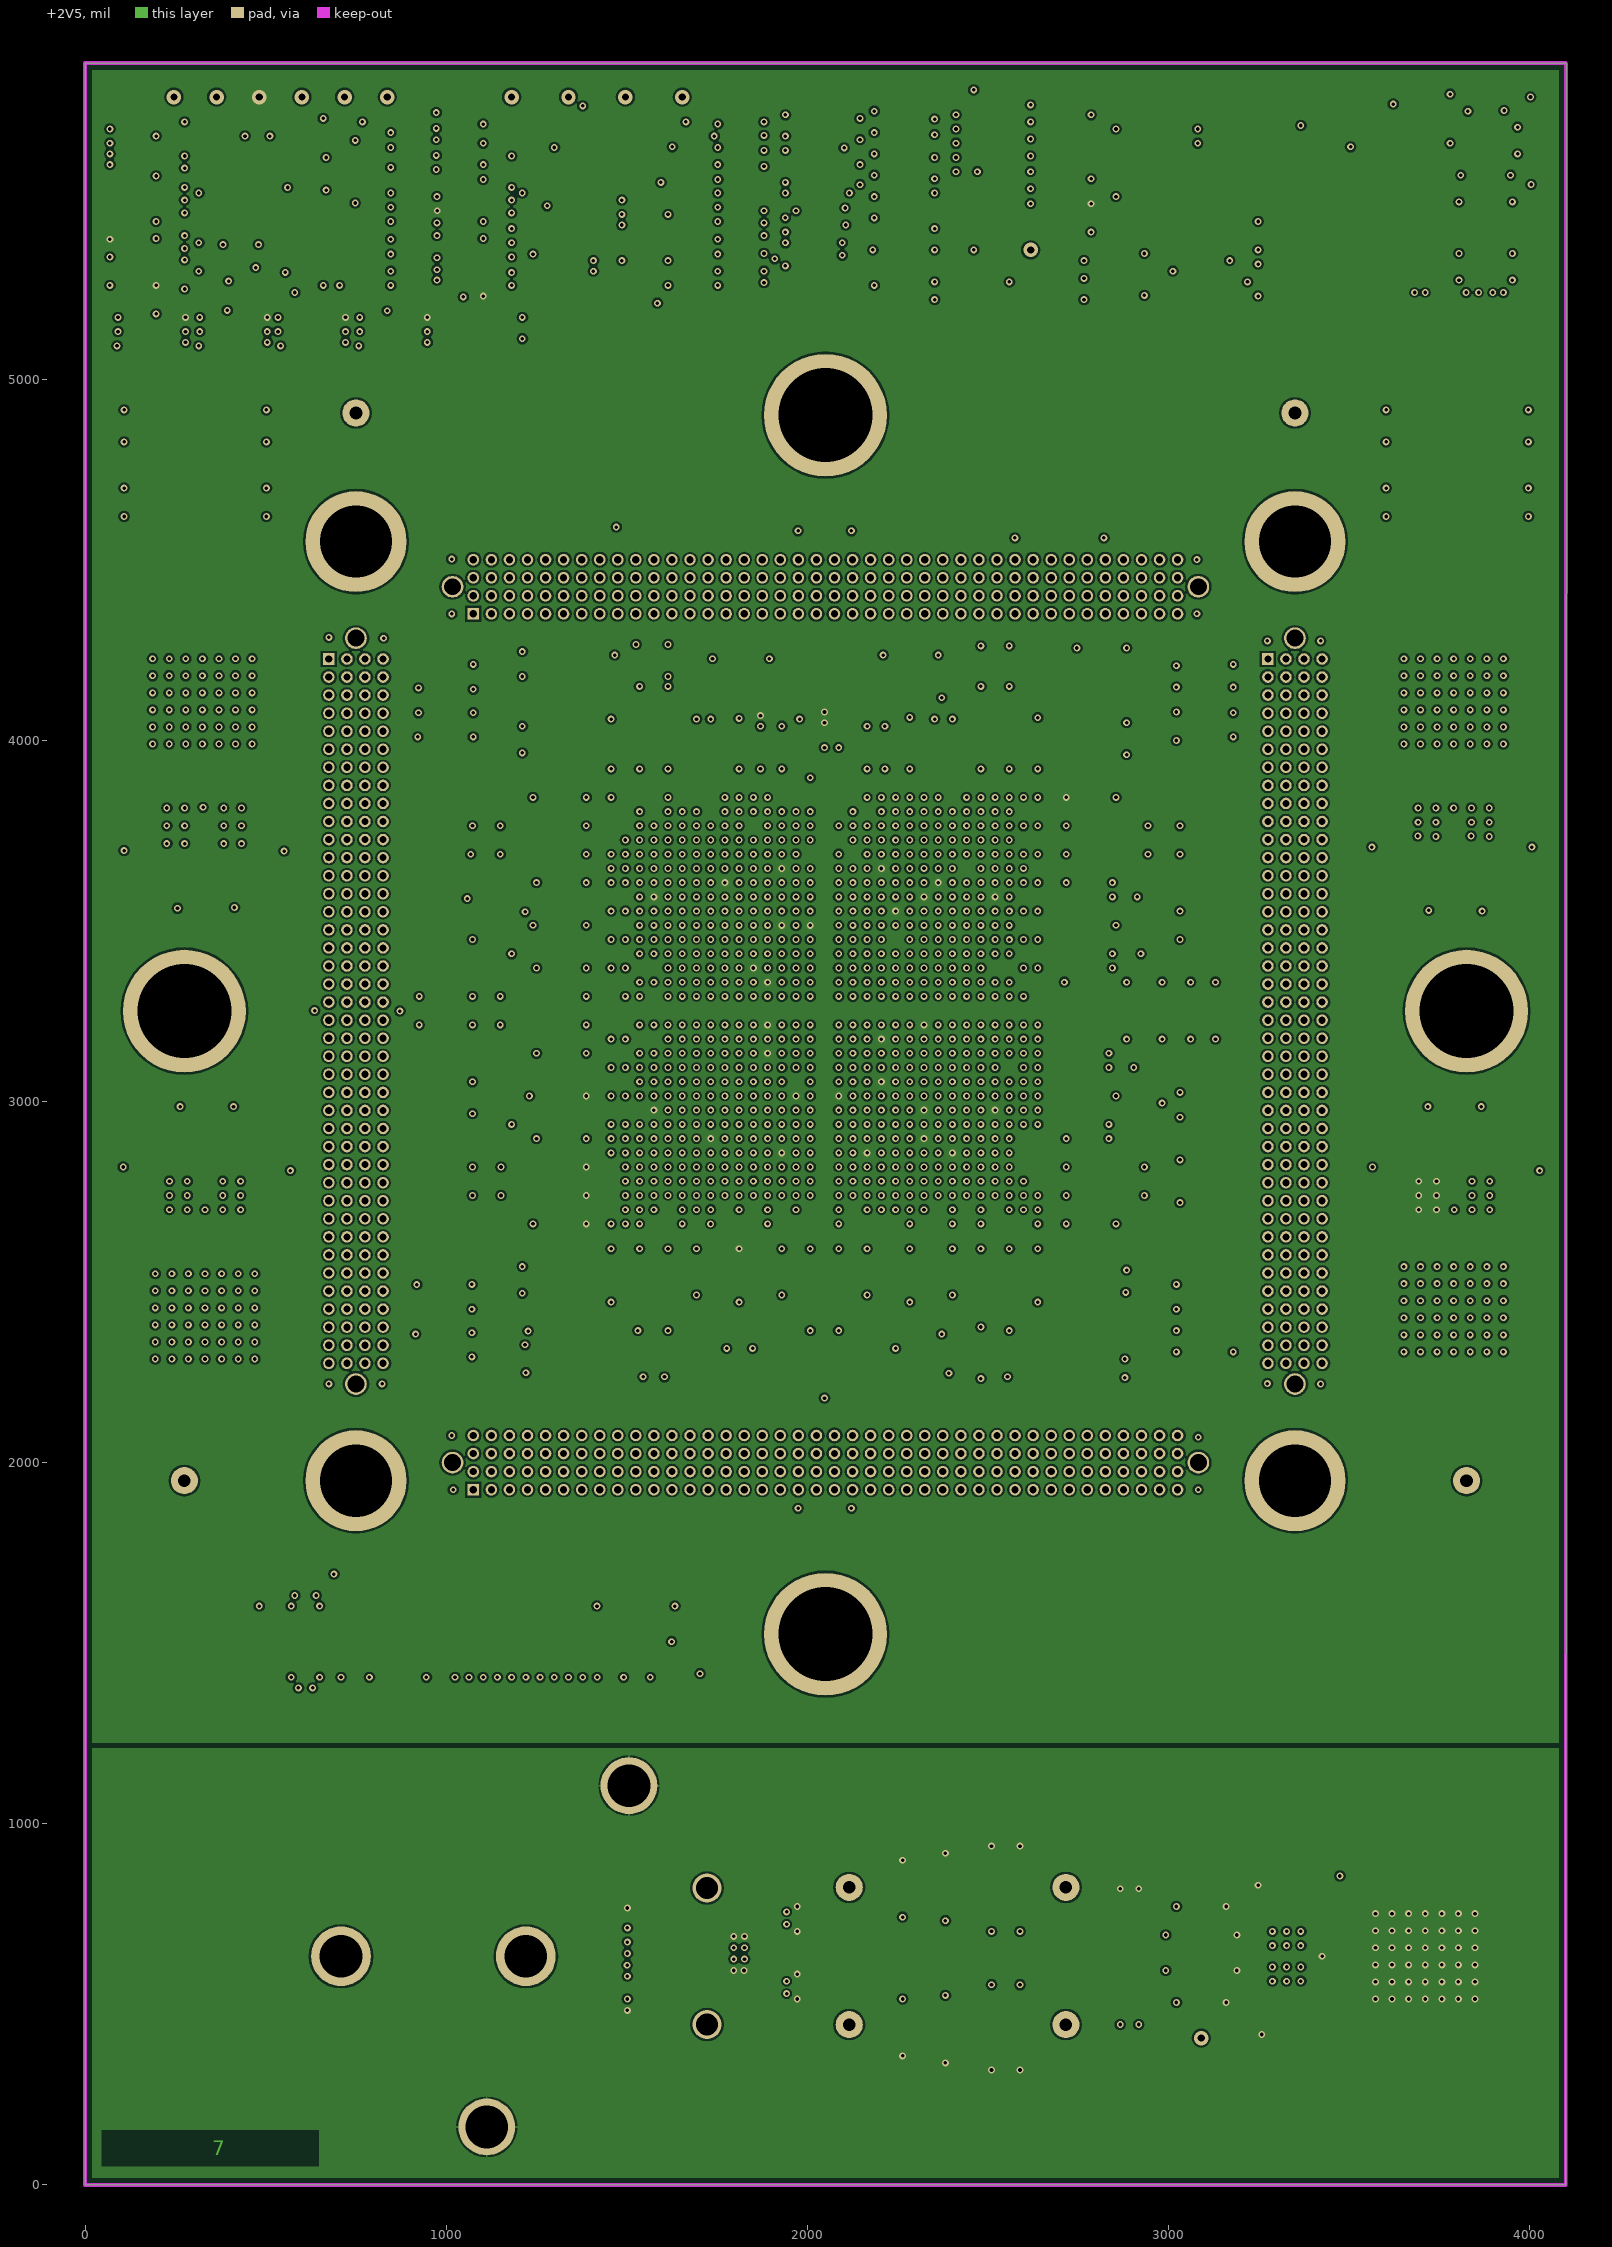
[diagram p7: +2V5]
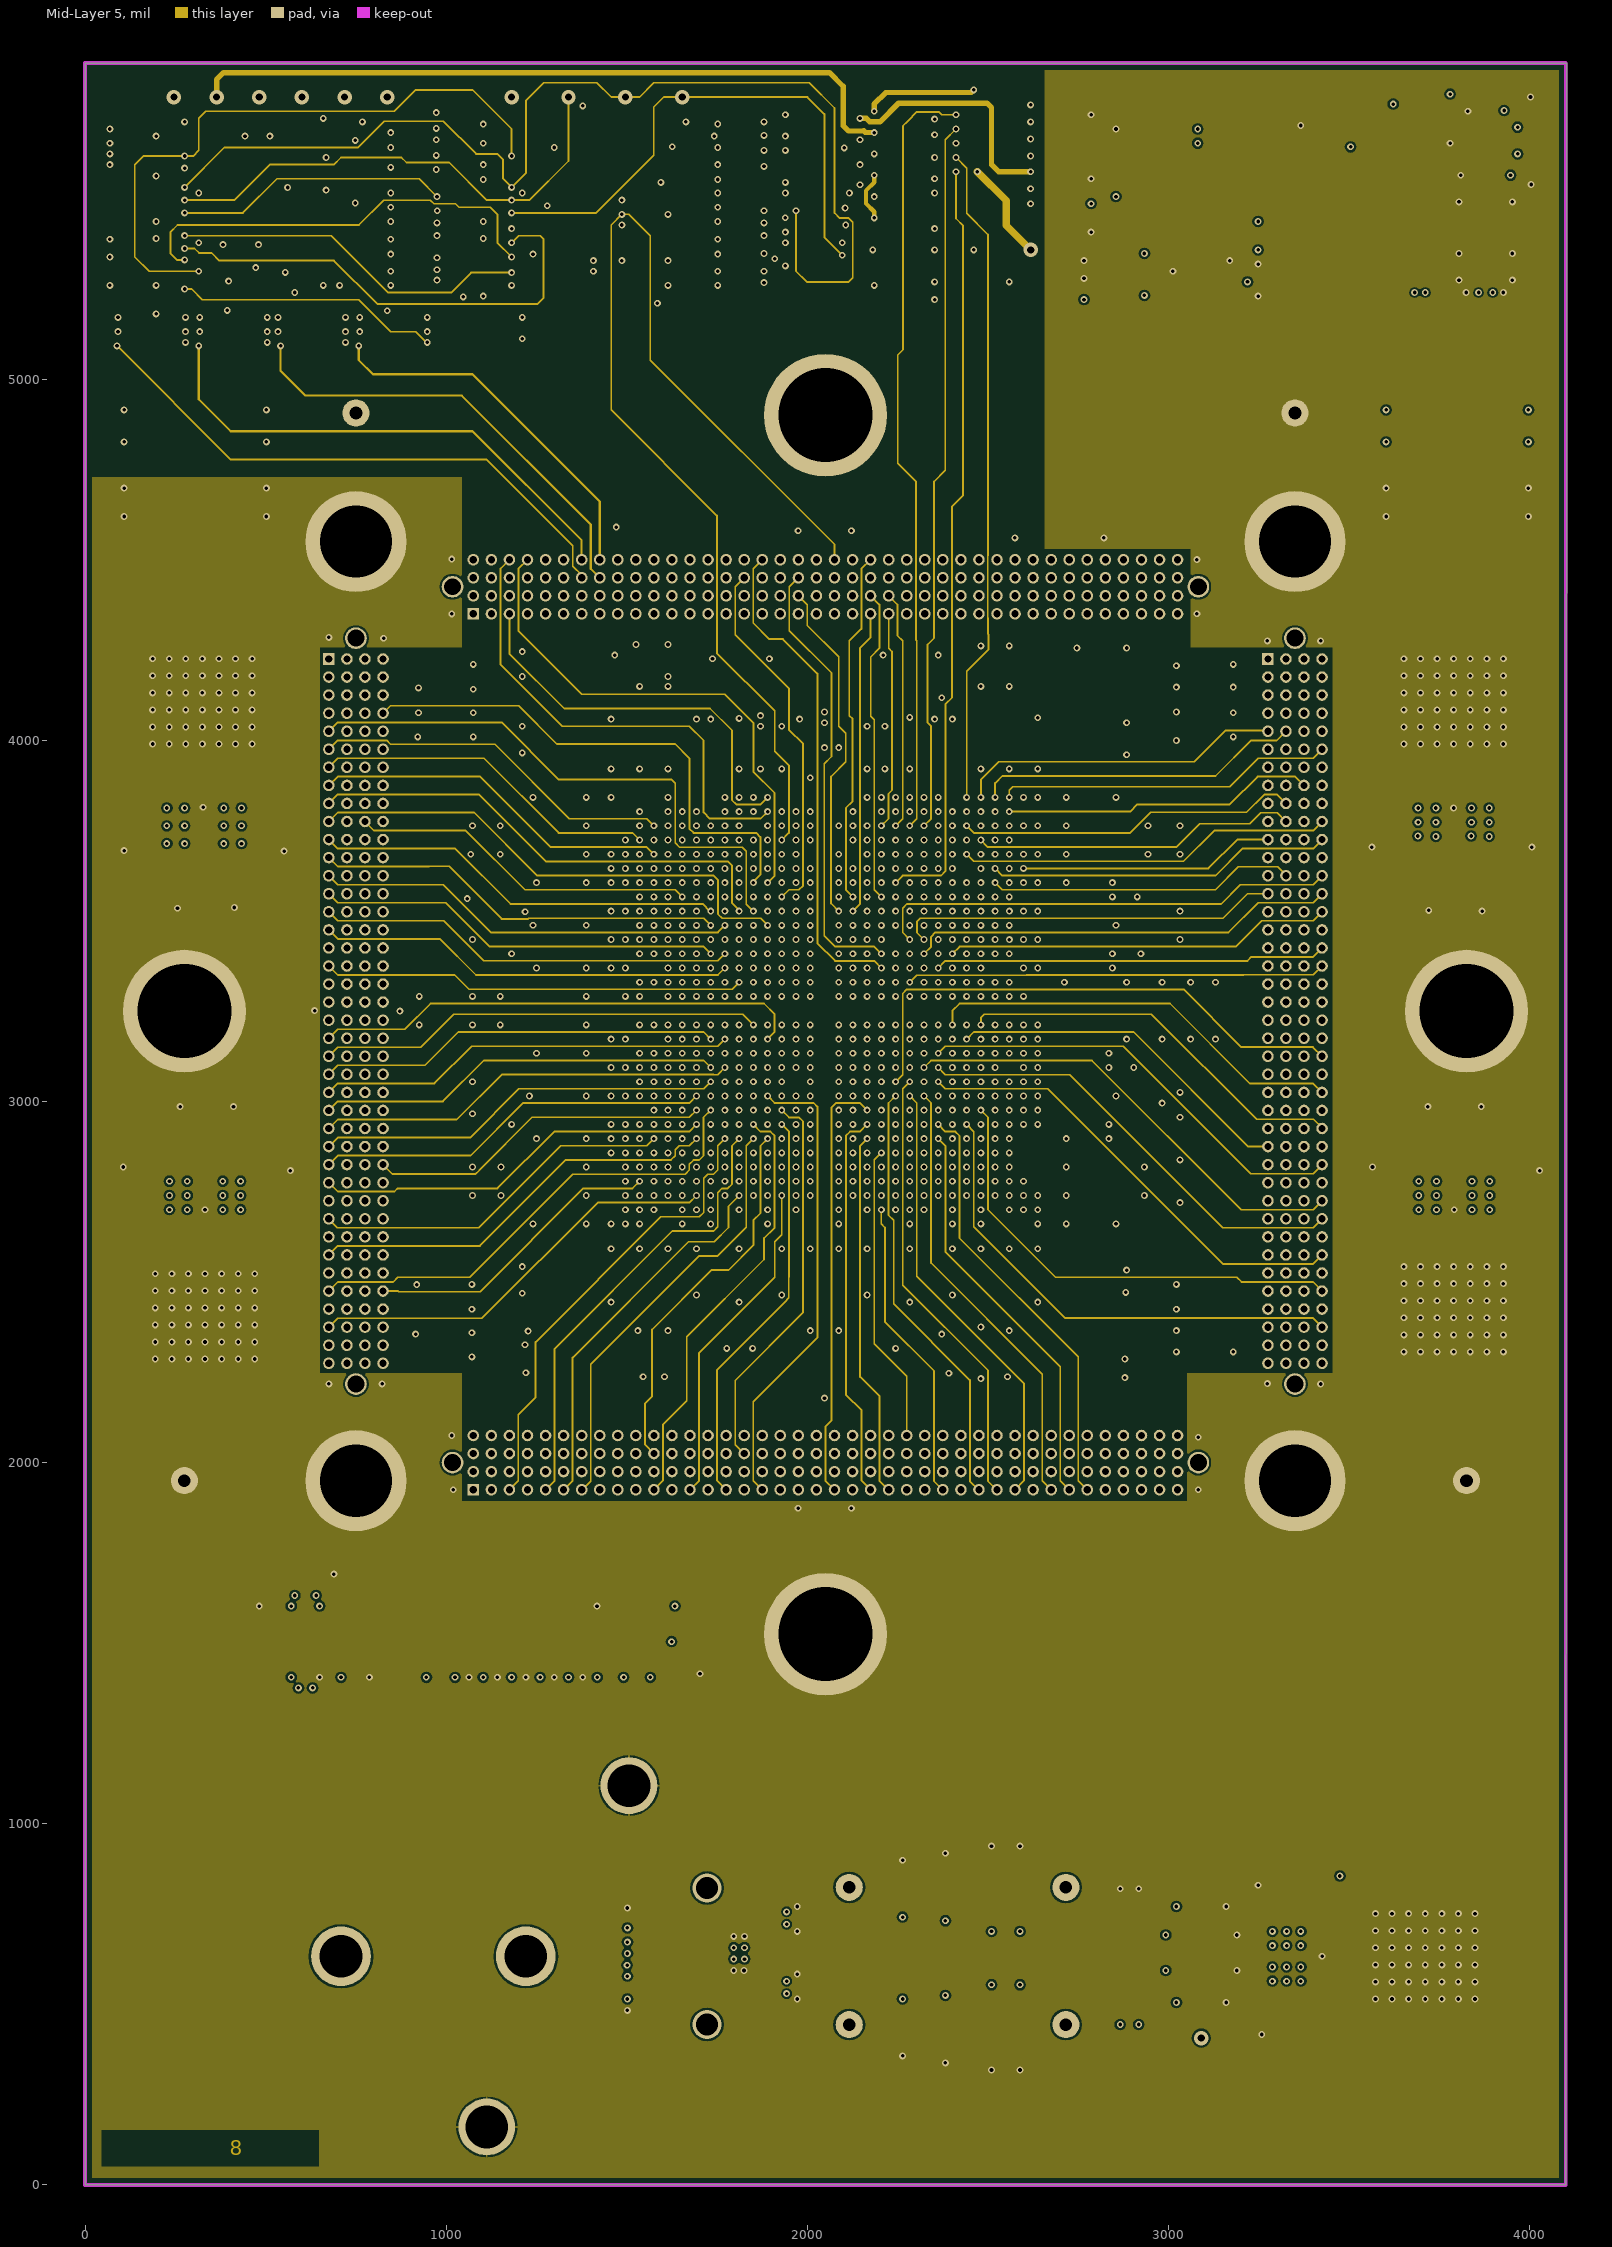
[diagram p8: Mid-Layer 5]
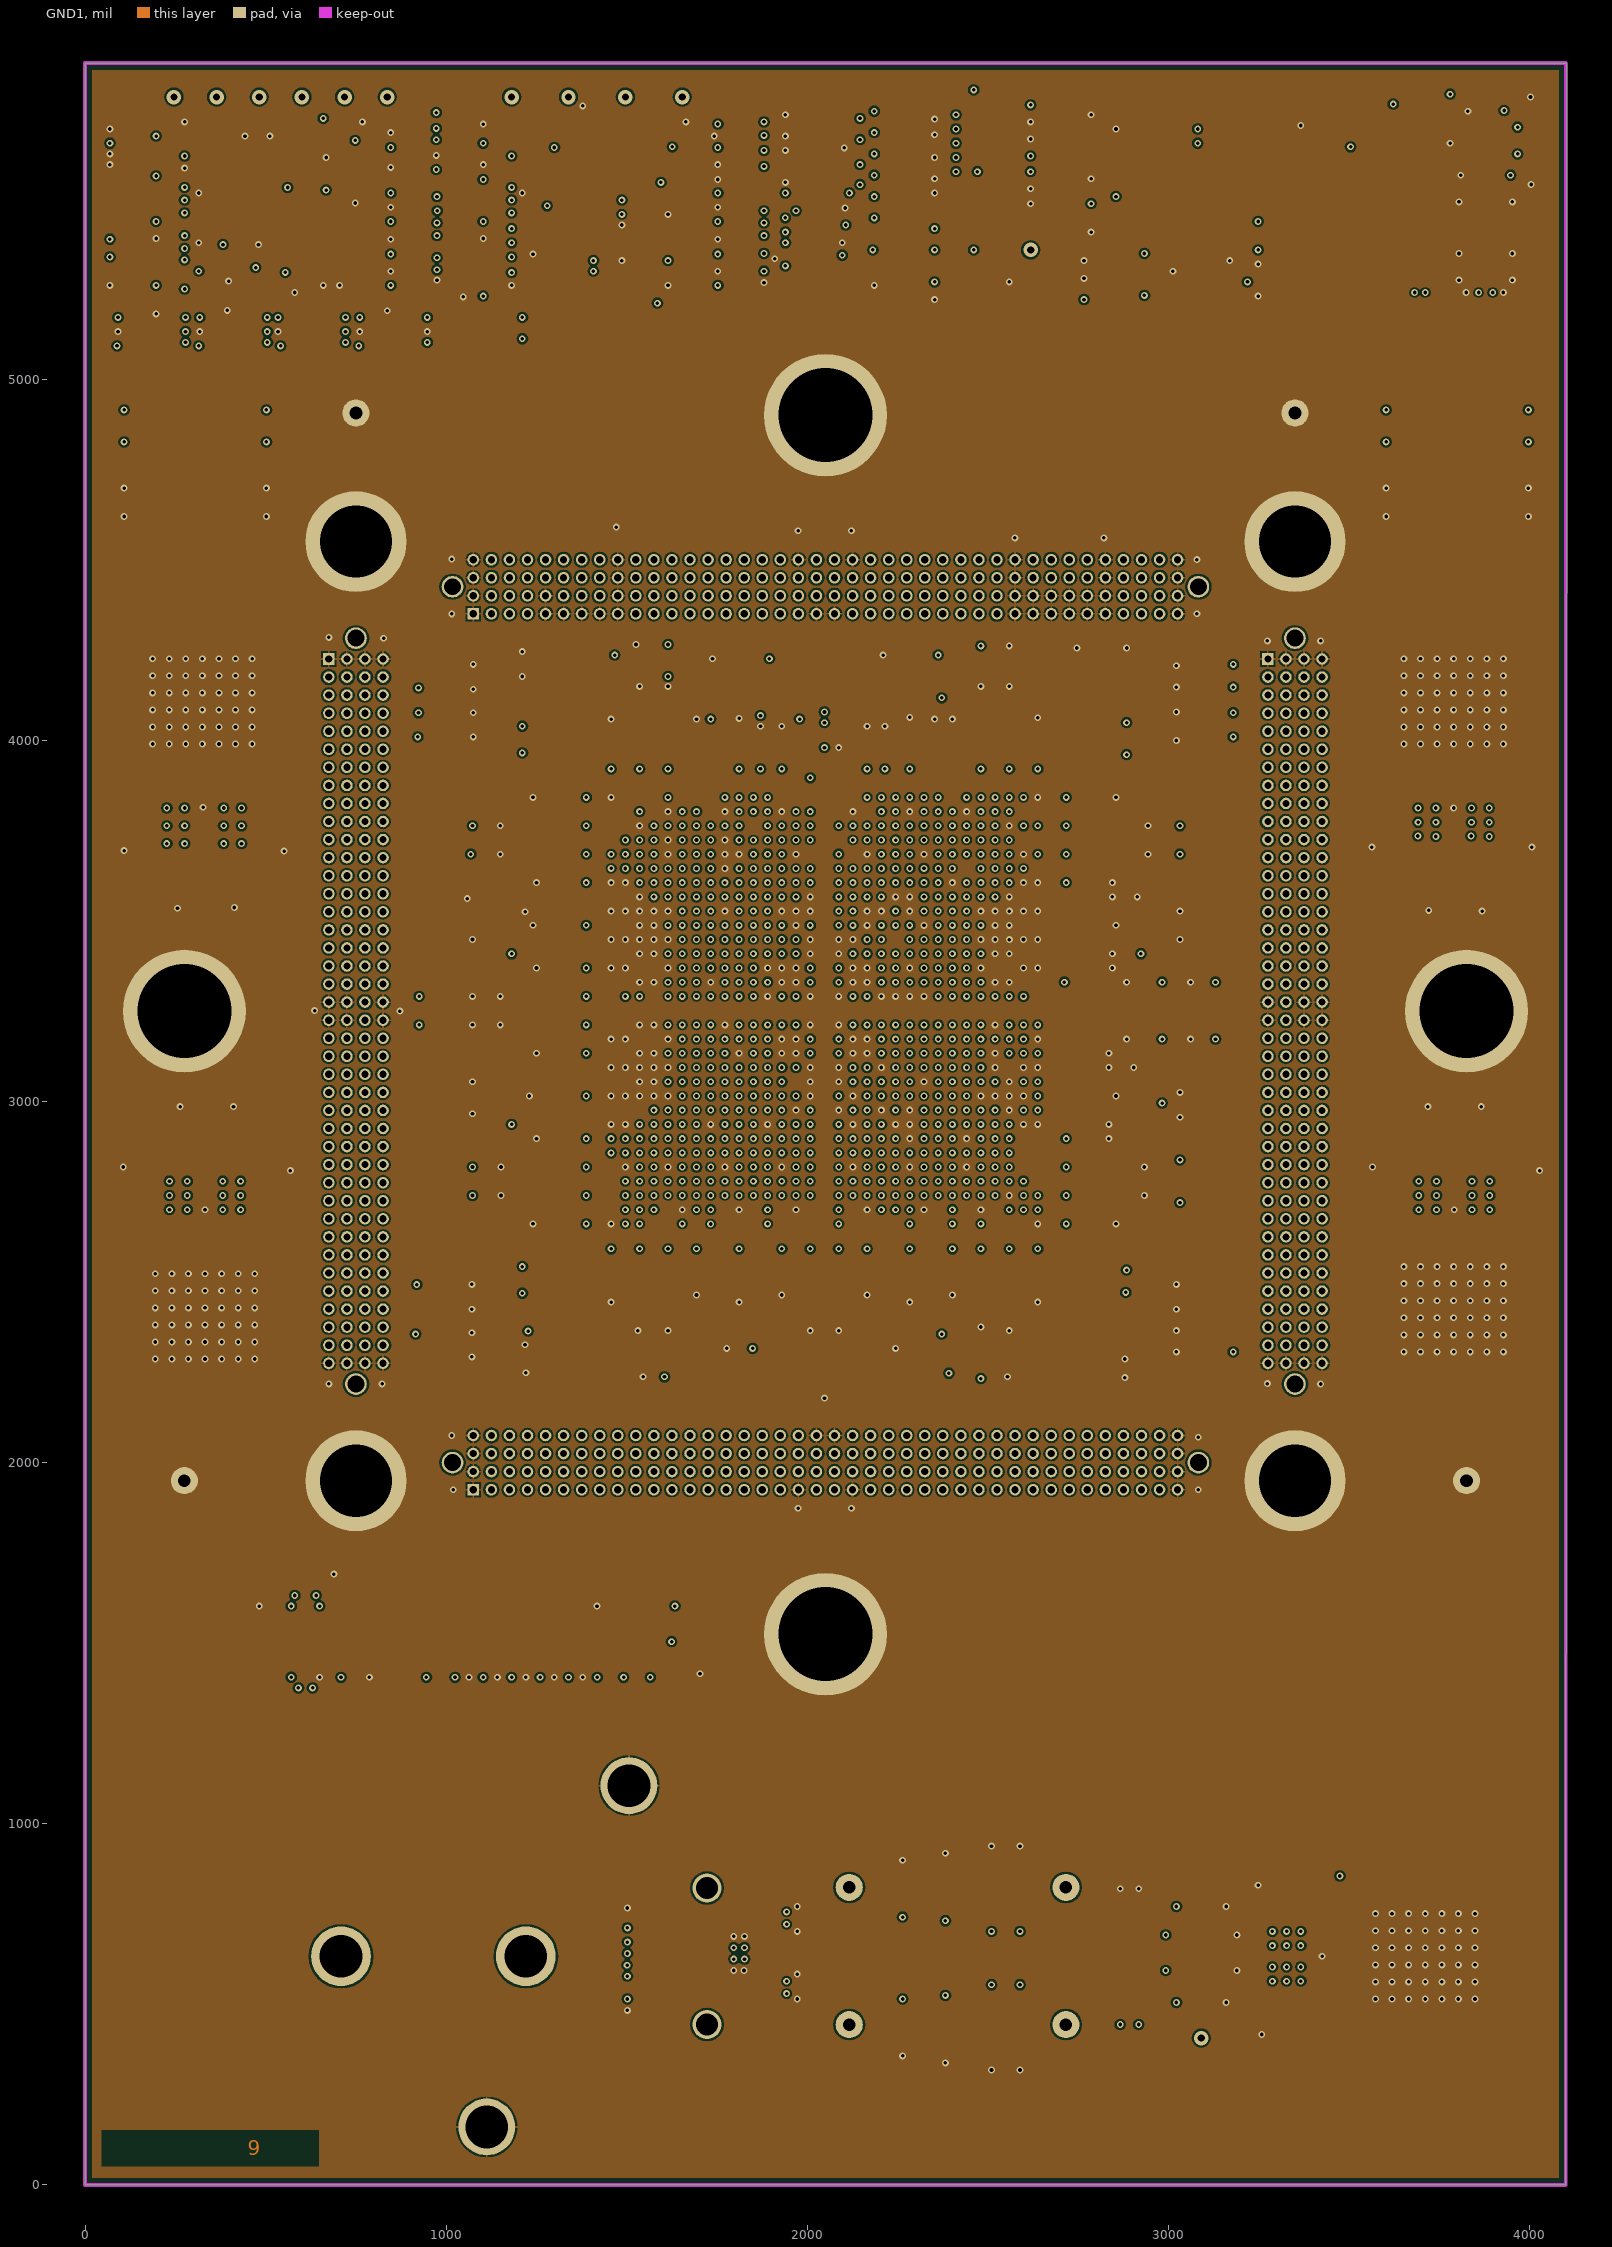
[diagram p9: GND1]
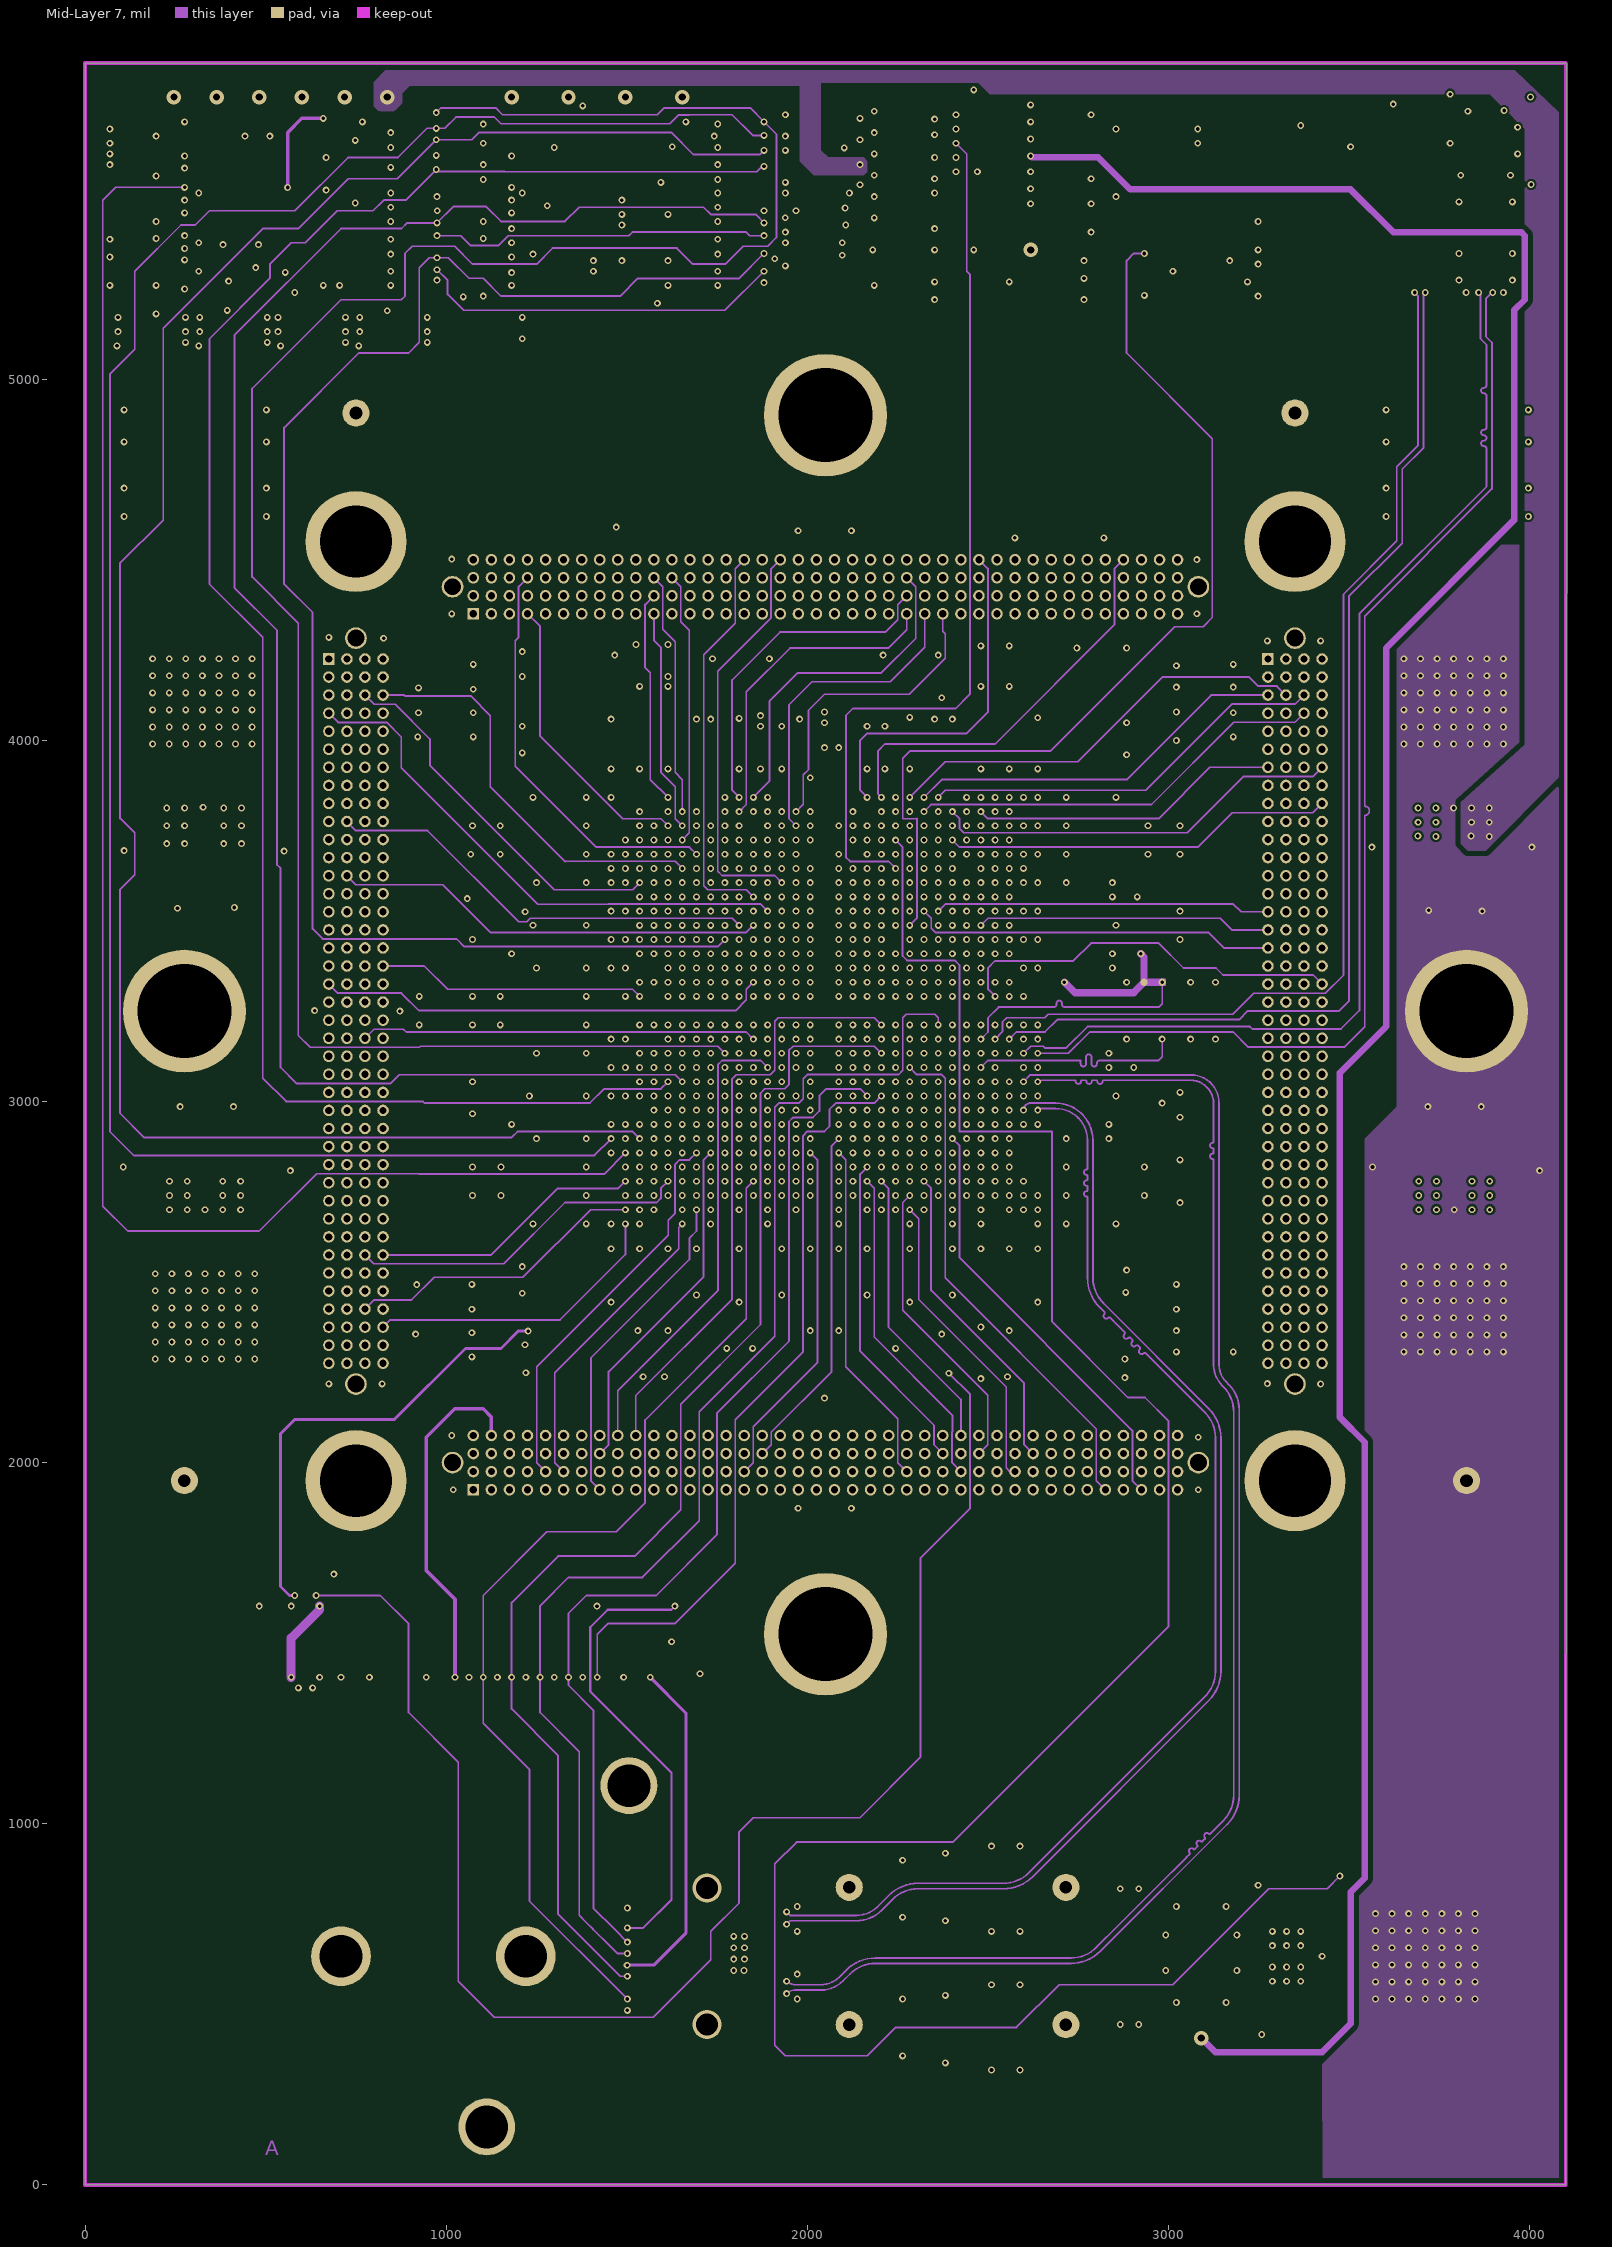
[diagram p10: Mid-Layer 7]
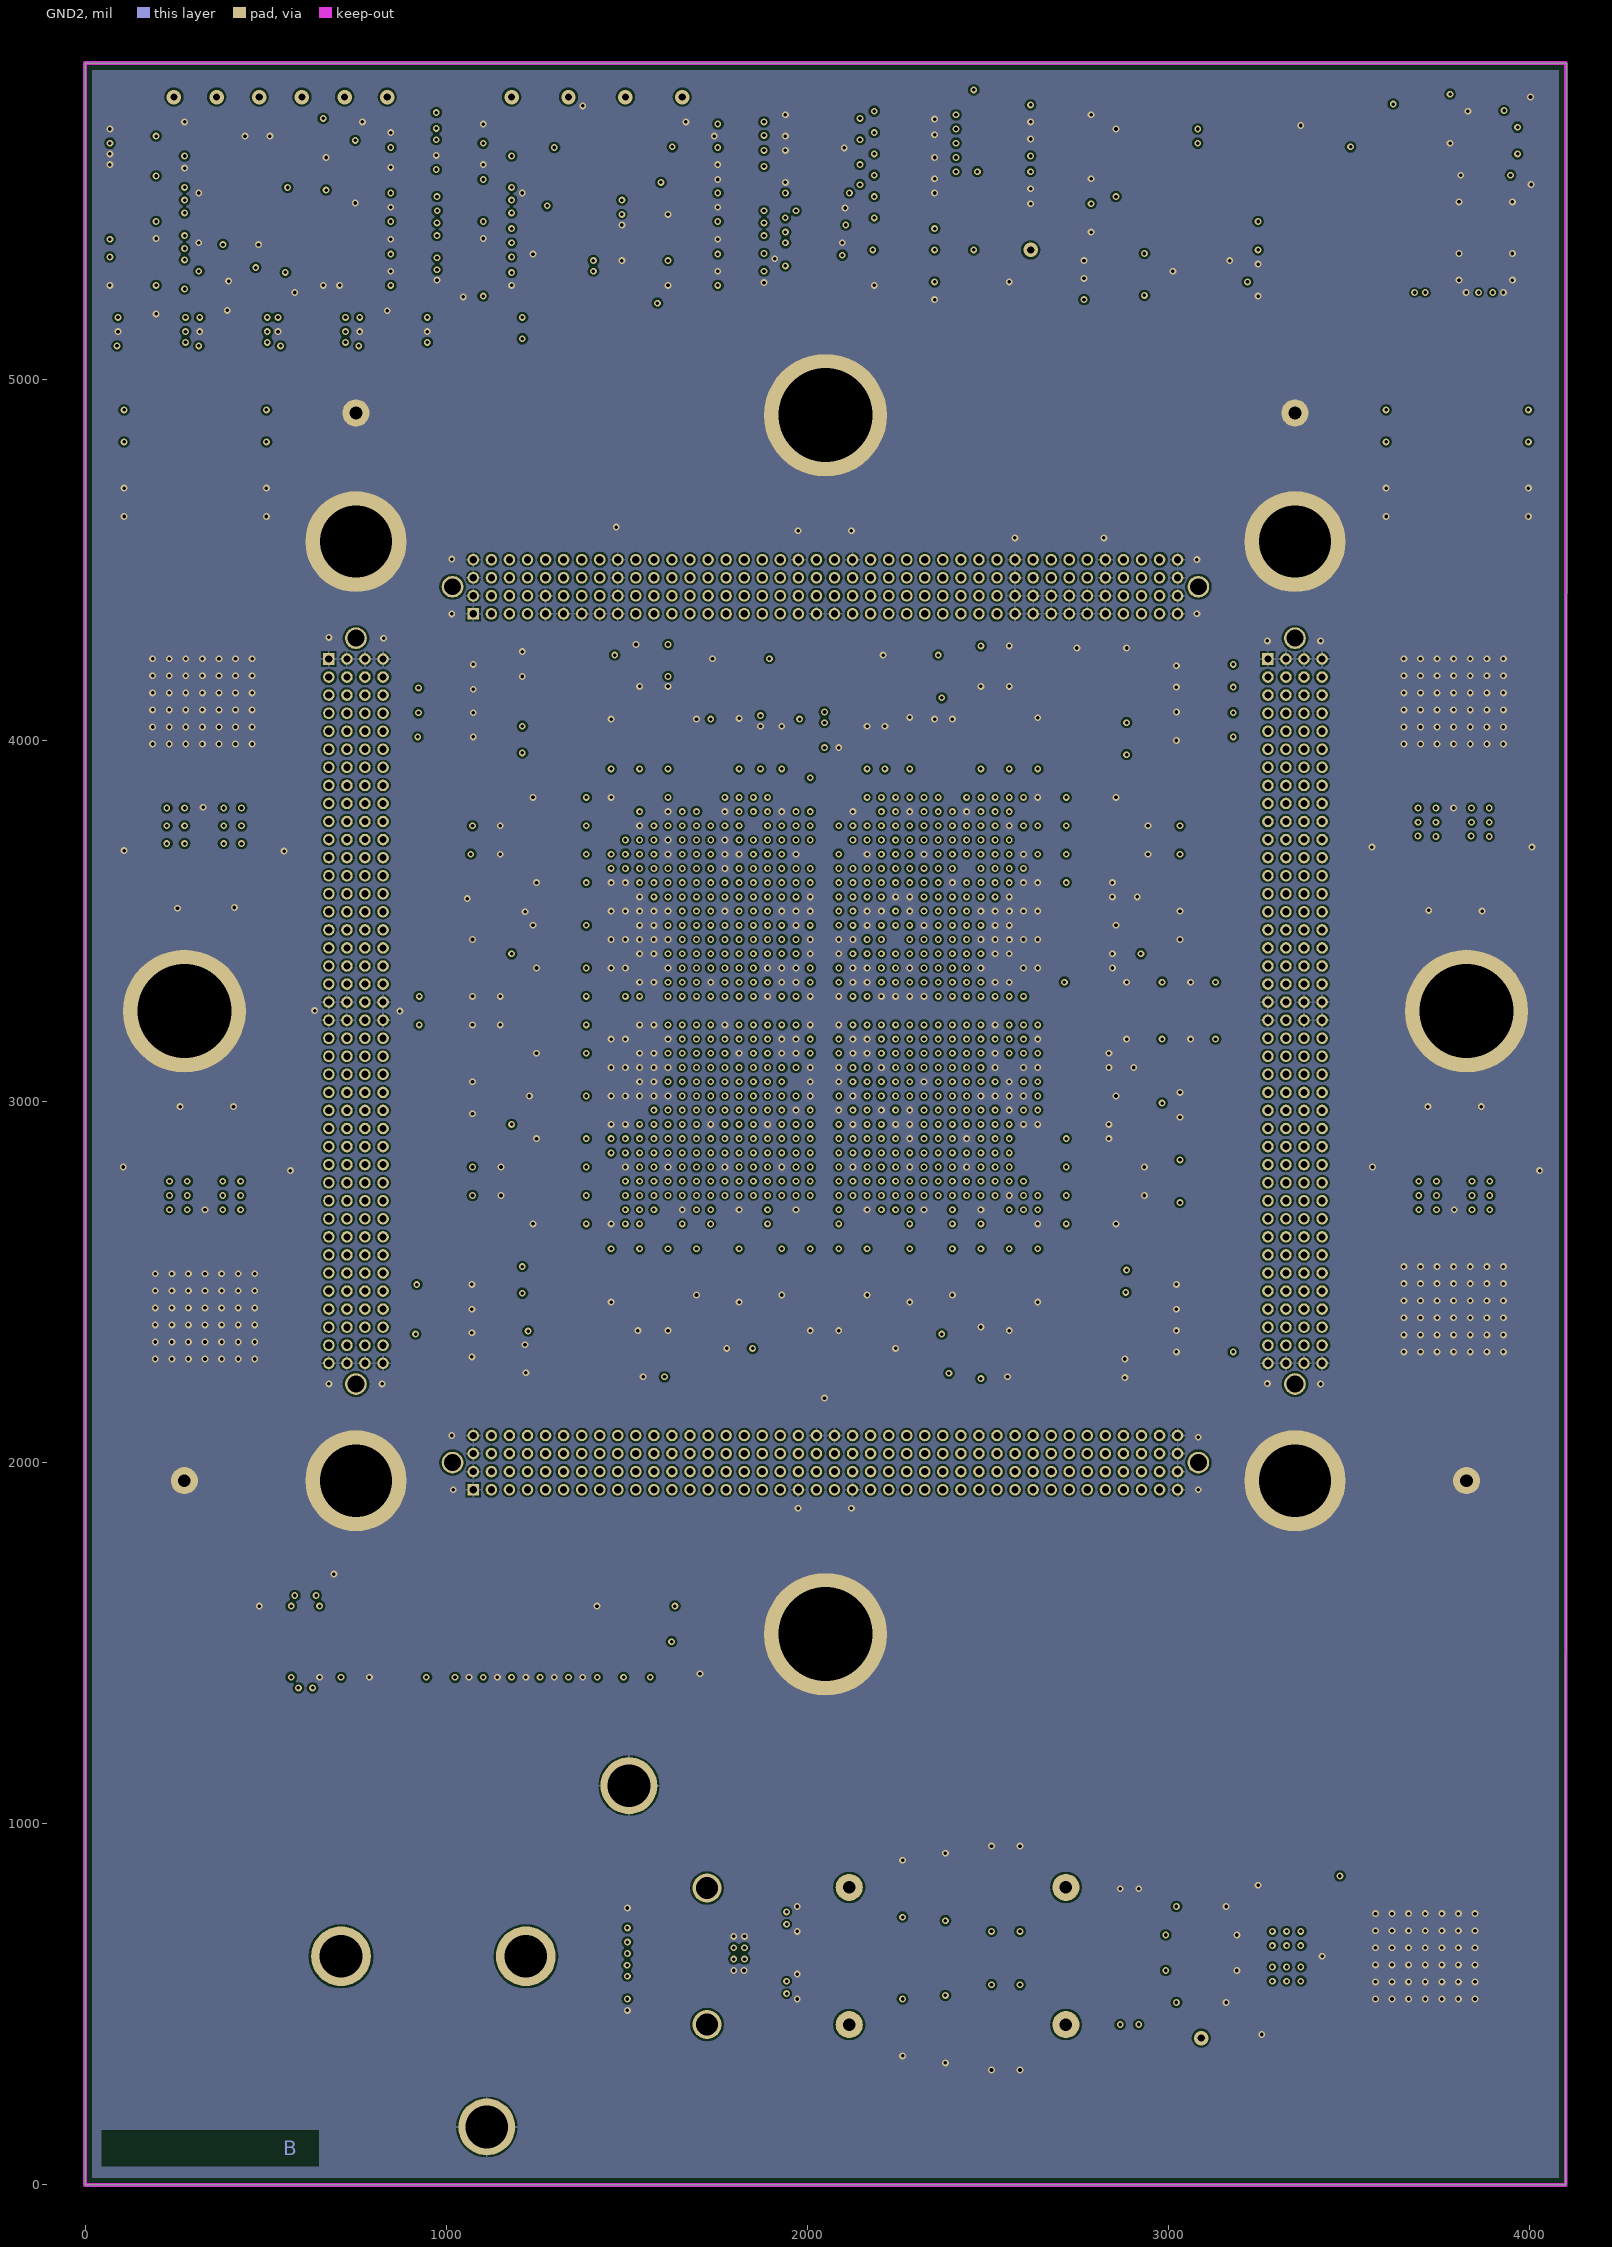
[diagram p11: GND2]
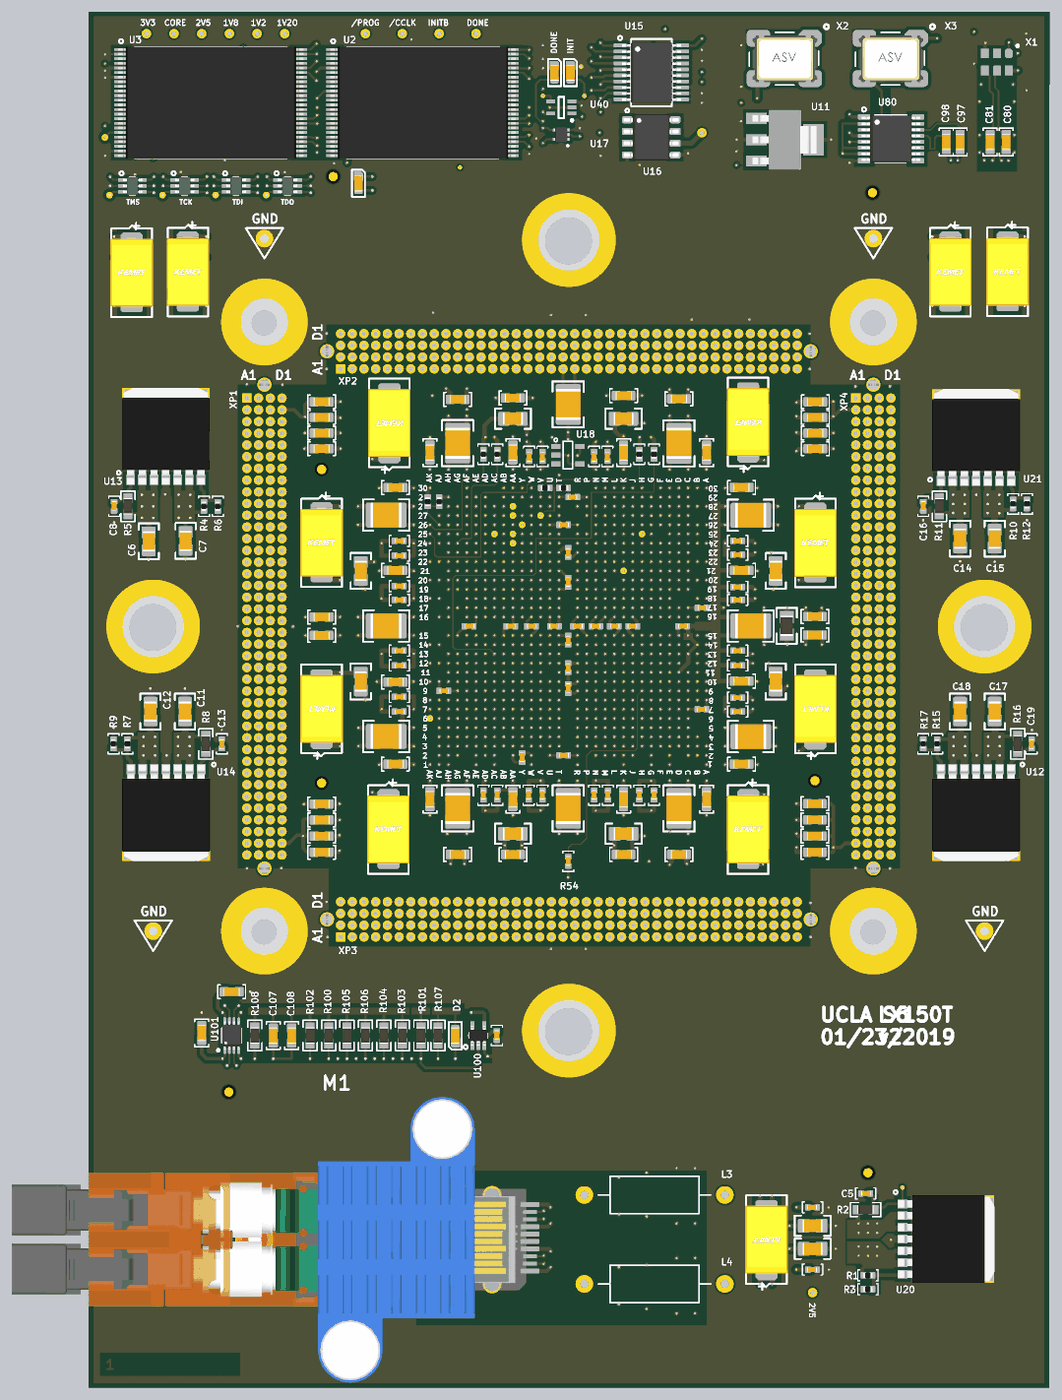
[diagram p19: 3D render of the assembled board from above, using the file's embedded part models]
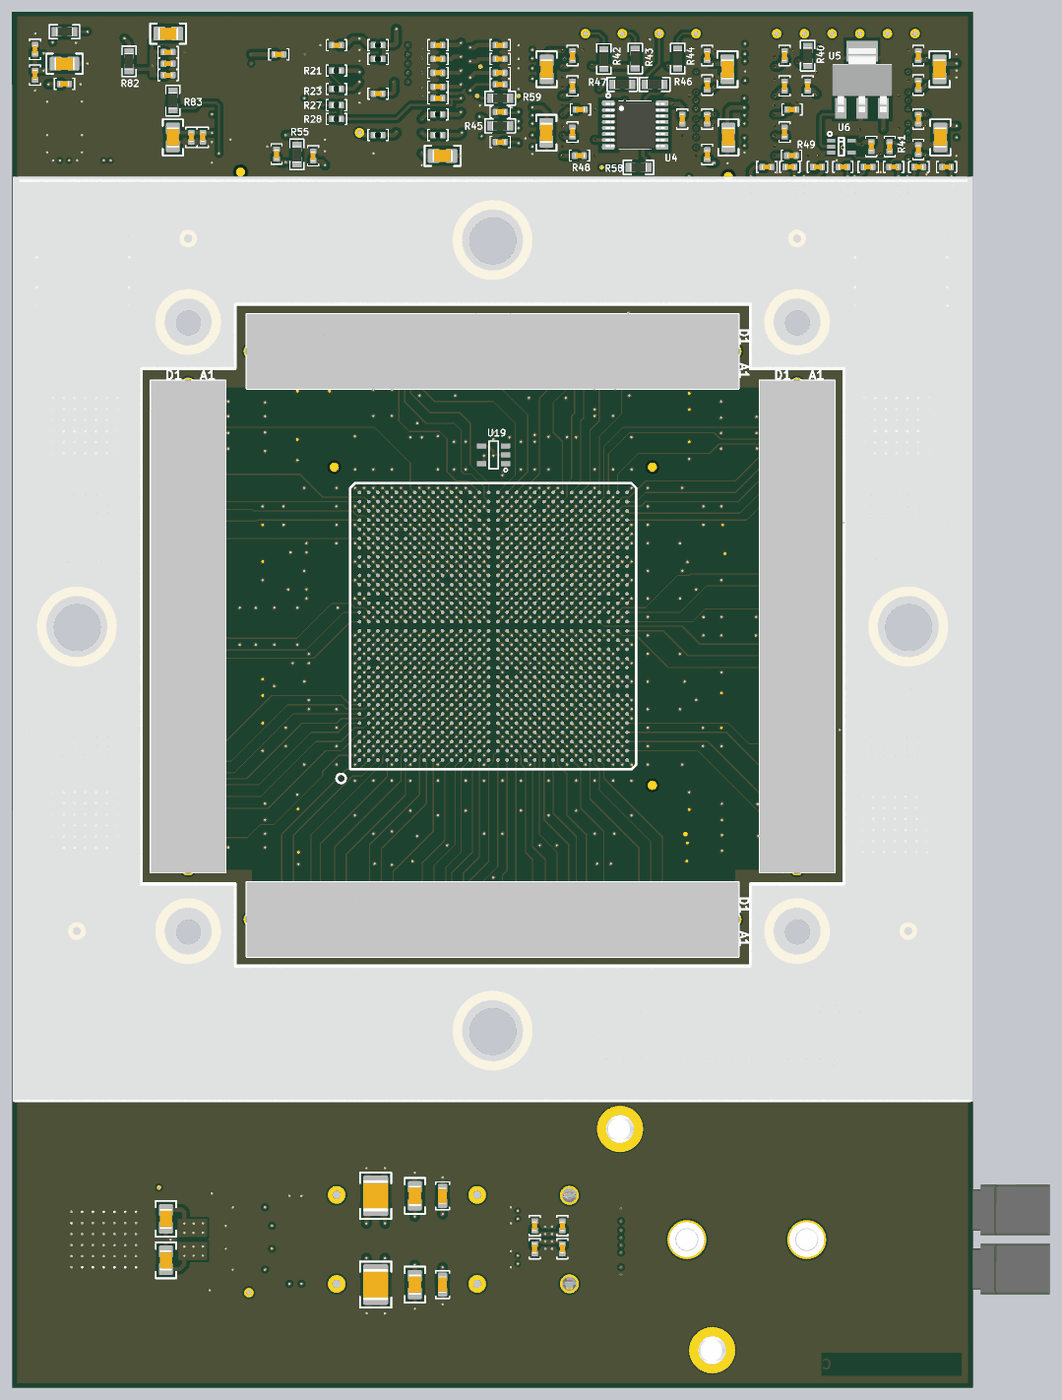
[diagram p20: 3D render of the assembled board from below, using the file's embedded part models]

## Layer stack, top to bottom
Top Solder: solder mask 1.4, Solder Resist, Dk 3.3
Top Layer: signal copper 2
Dielectric 1: prepreg 4.9, FR-4, Dk 4.2
Mid-Layer 1: signal copper 0.6
Dielectric4: core 5, FR-4, Dk 4.2
+3V3: signal copper 1.5
Dielectric 14: prepreg 4.9, Dk 4.2
Mid-Layer 2: signal copper 0.6
Dielectric5: core 5, FR-4, Dk 4.2
+1V2: signal copper 0.6
Dielectric6: prepreg 4.9, FR-4, Dk 4.2
Mid-Layer 4: signal copper 0.6
Dielectric7: core 5, FR-4, Dk 4.2
+2V5: signal copper 0.6
Dielectric12: prepreg 4.9, FR-4, Dk 4.2
Mid-Layer 5: signal copper 0.6
Dielectric8: core 5, FR-4, Dk 4.2
GND1: signal copper 0.6
Dielectric13: prepreg 4.9, FR-4, Dk 4.2
Mid-Layer 7: signal copper 0.6
Dielectric10: core 5, FR-4, Dk 4.2
GND2: signal copper 0.6
Dielectric3: prepreg 4.9, FR-4, Dk 4.2
Bottom Layer: signal copper 1.4
Bottom Solder: solder mask 0.4, Solder Resist, Dk 3.3

## Board outline
0,0.01 4099.99,0 4101.98,5875.01 0,5875.01

## Design rules (kind name [scope] priority, off if disabled: settings)
Clearance "Diff Pairs" [InNet('SFP_RX_P') or InNet('SFP_RX_N') or InNet('SFP_TX_N') or InNet('SFP_TX_P') or InNet('mgt_refclk0_n') or InNet('MGT_REFCLK0_P')or InNet('mgt_refclk1_n') or InNet('MGT_REFCLK1_P')  or InNet('osc0_n') or InNet('osc0_p')   or InNet('sfp_tx2_n') or InNet('sfp_tx2_p')            or InNet('osc80_n') or InNet('osc80_p')] p1: gap=5 ignorepadtopadclearanceinfootprint=TRUE
Clearance "FPGA Fanout" [InNet('XP*')  or InNet('led*')     or InNet('HSWAPEN')   or InNet('M1')  or InNet('M0')      or InNet('CSI_B')       or InNet('RDWR_B')    or InNet('MEZ_CLOCK')] p2: gap=5 ignorepadtopadclearanceinfootprint=TRUE except(6: Arc-THPad Arc-Via Track-THPad Track-Via; 7: Arc-Hole Track-Hole SMDPad-Hole THPad-Hole Via-Hole Fill-Hole Poly-Hole Region-Hole Text-Hole; 8: Arc-Arc Arc-Track Arc-SMDPad Track-Track Track-SMDPad SMDPad-SMDPad)
Clearance "General Clearance TopLy" [OnLayer('Top Layer')] p3: gap=8 ignorepadtopadclearanceinfootprint=TRUE except(7: SMDPad-SMDPad; 14: Arc-Poly Track-Poly SMDPad-Poly)
Clearance "General Clearance BotLy" [OnLayer('Bottom Layer')] p4: gap=8 ignorepadtopadclearanceinfootprint=TRUE except(6: Arc-SMDPad Track-SMDPad SMDPad-SMDPad; 14: Arc-Poly Track-Poly SMDPad-Poly)
Clearance "General Clearance" [All] p5: gap=6 ignorepadtopadclearanceinfootprint=TRUE except(7: Arc-Via Track-Via; 12: Poly-Region; 14: Arc-Arc Arc-Track Arc-Poly Track-Track Track-Poly SMDPad-Poly; 15: Fill-Poly Poly-Poly)
DiffPairsRouting [All] p1: maxlimit=16 minlimit=5 mostfreqgap=14 toplayer_mingap=16 toplayer_prefgap=16 toplayer_minwidth=8 toplayer_maxwidth=16 toplayer_prefwidth=8 midlayer1_minwidth=4 midlayer1_maxwidth=4 midlayer1_prefwidth=4 midlayer2_minwidth=4 midlayer2_maxwidth=4 midlayer2_prefwidth=4 midlayer3_minwidth=4 midlayer3_maxwidth=4 midlayer3_prefwidth=4 midlayer4_minwidth=4 midlayer4_maxwidth=4 midlayer4_prefwidth=4 midlayer5_minwidth=4 midlayer5_maxwidth=4 midlayer5_prefwidth=4 midlayer6_minwidth=4 midlayer6_maxwidth=10 midlayer6_prefwidth=4 midlayer7_mingap=10 midlayer7_maxgap=10 midlayer7_prefgap=10 midlayer7_minwidth=5 midlayer7_maxwidth=5 midlayer7_prefwidth=5 midlayer8_minwidth=4 midlayer8_maxwidth=10 midlayer8_prefwidth=4 midlayer9_minwidth=4 midlayer9_maxwidth=10 midlayer9_prefwidth=4 midlayer10_minwidth=4 midlayer10_maxwidth=10 midlayer10_prefwidth=4 bottomlayer_mingap=16 bottomlayer_prefgap=16 bottomlayer_minwidth=8 bottomlayer_maxwidth=16 bottomlayer_prefwidth=8 maxuncoupledlength=500
HoleSize [All] p1: absolutevalues=TRUE maxlimit=260 minlimit=10 maxpercent=80.000 minpercent=20.000
MatchedLengths MatchedLengthsOsc80 [InDifferentialPair('osc80')] p1: tolerance=100 checknetsindiffpair=TRUE checkdiffpairvsdiffpair=FALSE checkxsignals=FALSE checkothers=FALSE
MatchedLengths mgtrref [InNet('mgtavttrcal') or InNet('mgtrref')] p2: tolerance=5 checknetsindiffpair=FALSE checkdiffpairvsdiffpair=TRUE checkxsignals=TRUE checkothers=TRUE
MatchedLengths [All] p3: tolerance=10 checknetsindiffpair=TRUE checkdiffpairvsdiffpair=FALSE checkxsignals=FALSE checkothers=FALSE
MinimumAnnularRing [All] p1: minimumring=4.5
MinimumSolderMaskSliver [All] p1: minsoldermaskwidth=4.7
ParallelSegment Adjacent [All] p1: limit=800 gap=10
ParallelSegment Parallel [All] p2: limit=100 gap=10
PlaneClearance "Differential Pair Plane Keepout" [InNet('SFP_RX_P') or InNet('SFP_RX_N') or InNet('SFP_TX_N') or InNet('SFP_RX_N') or InNet('MGT_REFCLK_N') or InNet('MGT_REFCLK_P')  or InNet('osc0_n') or InNet('osc0_p')] p1: clearance=20
PlaneClearance [All] p2: clearance=6
PlaneConnect PlaneConnectVia [IsVia] p1: planeconnectstyle=Direct reliefexpansion=20 reliefentries=4 reliefconductorwidth=10 reliefairgap=10
PlaneConnect [All] p2: planeconnectstyle=Relief reliefexpansion=7.09 reliefentries=4 reliefconductorwidth=5.12 reliefairgap=10
PolygonConnect via_connect [IsVia] p1: connectstyle=Direct reliefconductorwidth=10 reliefentries=4 polygonreliefangle="90 Angle" airgapwidth=10
PolygonConnect no_relief [InPolygonClass('no_relief')  or InComponent('H*')     or InComponent('TP*')       or InComponent('U13')    or InComponent('U14') or InComponent('U20') or InComponent('U21')      or InComponent('U12')] p2: connectstyle=Direct reliefconductorwidth=10 reliefentries=4 polygonreliefangle="90 Angle" airgapwidth=10
PolygonConnect [All] p3: connectstyle=Relief reliefconductorwidth=6 reliefentries=4 polygonreliefangle="90 Angle" airgapwidth=5
RoutingVias [All] p1: holewidth=8 width=18 viastyle="Through Hole" minholewidth=8 minwidth=18 maxholewidth=8 maxwidth=20
SilkToSolderMaskClearance [IsPad] p1: minsilkscreentomaskgap=4.75 clearancetoexposedcopper=TRUE
SolderMaskExpansion [All] p1: expansion=0
ViasUnderSMD VIA_UnderSMD_1 [(Name = 'U12-6') Or (Name = 'U13-6') Or (Name = 'U14-8')] p1: allowed=TRUE
Width Power [InNet('+1.2V') Or InNet('+1.8V') Or InNet('+2.5V') Or InNet('+2.5V/2') Or InNet('+3.3V') Or InNet('+3.3V/2') Or InNet('+VCORE')           or          InNet('+VTBOT') Or InNet('+VTOP')] p1: maxlimit=196.85 minlimit=8 preferedwidth=10
Width [All] p2: maxlimit=197 minlimit=5 preferedwidth=5 toplayer_prefwidth=8 midlayer6_prefwidth=4 midlayer8_prefwidth=4 midlayer9_prefwidth=4 midlayer10_prefwidth=4 bottomlayer_prefwidth=8 minimp=50.000000 maximp=50.000000 favimp=50.000000
24 further rules are at their usual default settings.

## Classes and differential pairs
differential pair sfp_tx2: +sfp_tx2_p -sfp_tx2_n
differential pair SFP_TX: +SFP_TX_P -SFP_TX_N
differential pair osc0: +osc0_p -osc0_n
differential pair mgt_refclk0: +mgt_refclk0_p -mgt_refclk0_n
differential pair mgt_refclk1: +mgt_refclk1_p -mgt_refclk1_n
differential pair osc80: +osc80_p -osc80_n

## Components (designator, comment, footprint, x,y, rotation, side; value= is the part's Value field where it differs from the comment)
1V2_INT "Test Point Via" MC_S6/TH/TPVIA 718.5,5780.91 r0 top locked
1V2_MGT "Test Point Via" MC_S6/TH/TPVIA 836.61,5780.91 r0 top locked
1V8 "Test Point Via" MC_S6/TH/TPVIA 600.39,5780.91 r0 top locked
2V5_AUX "Test Point Via" MC_S6/TH/TPVIA 482.28,5780.91 r90 top
2V5_SFP "Test Point Via" MC_S6/TH/TPVIA 3090.55,406.7 r0 top
3V3 "Test Point Via" MC_S6/TH/TPVIA 246.06,5780.91 r0 top locked
AWAKE "Test Point Via" MC_S6/TH/TPVIA 1811.03,3605.7 r0 top locked
BUSY "Test Point Via" MC_S6/TH/TPVIA 1811.03,3645.07 r0 top locked
C1 "4.7UF" MC_S6/SM/C_0603_IPC 2519.68,4221.86 r0 top locked
C2 "4.7UF" MC_S6/SM/C_0603_IPC 1574.8,4219.89 r180 top locked
C3 "10uF" MC_S6/SM/C_0805_IPC 3444.88,721.66 r270 bottom locked
C4 "10uF" MC_S6/SM/C_0805_IPC 3444.88,544.49 r90 bottom locked
C5 "0.01uF" MC_S6/SM/C_0402_IPC 3316.93,829.93 r180 top locked
C6 "10UF" MC_S6/SM/C_0805_IPC 255.91,3613.59 r270 top
C7 "10UF" MC_S6/SM/C_0805_IPC 413.39,3615.56 r270 top
C8 "0.01uF" MC_S6/SM/C_0402_IPC 108.27,3763.19 r270 top locked
C9 "4.7UF" MC_S6/SM/C_0603_IPC 3100.39,2286.82 r180 top locked
C10 "4.7UF" MC_S6/SM/C_0603_IPC 994.09,2286.82 r0 top locked
C11 "10uF" MC_S6/SM/C_0805_IPC 410.88,2887.21 r90 top locked
C12 "10UF" MC_S6/SM/C_0805_IPC 263.24,2887.21 r90 top locked
C13 "0.01UF" MC_S6/SM/C_0402_IPC 568.36,2749.42 r90 top locked
C14 "10uF" MC_S6/SM/C_0805_IPC 3720.47,3625.4 r270 top locked
C15 "10uF" MC_S6/SM/C_0805_IPC 3868.11,3625.4 r270 top locked
C16 "0.01uF" MC_S6/SM/C_0402_IPC 3562.99,3763.19 r270 top locked
C17 "10uF" MC_S6/SM/C_0805_IPC 3868.11,2887.21 r90 top
C18 "10uF" MC_S6/SM/C_0805_IPC 3720.47,2887.21 r90 top
C19 "0.01uF" MC_S6/SM/C_0402_IPC 4025.59,2749.41 r90 top
C20 "0.47uF" MC_S6/SM/C_0402_IPC 2283.46,5731.7 r0 bottom locked
C21 "0.47uF" MC_S6/SM/C_0402_IPC 2017.72,5731.7 r180 bottom locked
C22 "0.47uF" MC_S6/SM/C_0402_IPC 2283.46,5672.64 r0 bottom locked
C23 "0.47uF" MC_S6/SM/C_0402_IPC 2017.72,5672.64 r180 bottom locked
C24 "0.47uF" MC_S6/SM/C_0402_IPC 2283.46,5613.59 r0 bottom locked
C25 "0.47uF" MC_S6/SM/C_0402_IPC 2017.72,5613.59 r180 bottom locked
C26 "0.01uF" MC_S6/SM/C_0402_IPC 2283.46,5554.53 r0 bottom locked
C27 "0.01uF" MC_S6/SM/C_0402_IPC 2017.72,5564.38 r180 bottom
C28 "0.1UF" MC_S6/SM/C_0402_IPC 2716.54,5731.7 r0 bottom locked
C29 "10uF" MC_S6/SM/C_0805_IPC 2263.78,5259.26 r180 bottom locked
C30 "0.1uF" MC_S6/SM/C_0402_IPC 1937.01,3976.24 r90.5 top locked
C31 "0.1UF" MC_S6/SM/C_0402_IPC 2539.37,5525.01 r0 bottom locked
C32 "0.1UF" MC_S6/SM/C_0402_IPC 2816.19,5259.26 r90 bottom locked
C33 "0.47uF" MC_S6/SM/C_0402_IPC 2283.46,5505.32 r0 bottom
C40 "0.47uF" MC_S6/SM/C_0402_IPC 111.55,5212.01 r0 bottom locked
C41 "0.47uF" MC_S6/SM/C_0402_IPC 229.66,5212.01 r180 bottom locked
C42 "0.47uF" MC_S6/SM/C_0402_IPC 337.93,5212.01 r0 bottom locked
C43 "0.47uF" MC_S6/SM/C_0402_IPC 446.19,5212.01 r180 bottom locked
C44 "0.47uF" MC_S6/SM/C_0402_IPC 554.46,5212.01 r0 bottom locked
C45 "0.47uF" MC_S6/SM/C_0402_IPC 662.73,5212.01 r0 bottom locked
C46 "0.47uF" MC_S6/SM/C_0402_IPC 780.84,5212.01 r0 bottom locked
C47 "0.47uF" MC_S6/SM/C_0402_IPC 879.26,5212.01 r180 bottom locked
C50 "0.1UF" MC_S6/SM/C_0402_IPC 232.28,5561.62 r90 bottom locked
C51 "0.1UF" MC_S6/SM/C_0402_IPC 803.15,5360.83 r90 bottom locked
C52 "0.1UF" MC_S6/SM/C_0402_IPC 803.15,5557.68 r90 bottom locked
C53 "0.1UF" MC_S6/SM/C_0402_IPC 803.15,5687.62 r90 bottom locked
C54 "10uF" MC_S6/SM/C_0805_IPC 1818.9,5628.55 r270 bottom locked
C55 "0.1UF" MC_S6/SM/C_0402_IPC 232.28,5687.6 r90 bottom locked
C56 "0.1UF" MC_S6/SM/C_0402_IPC 771.65,5457.29 r180 bottom locked
C57 "0.1UF" MC_S6/SM/C_0402_IPC 232.28,5415.95 r270 bottom locked
C58 "10uF" MC_S6/SM/C_0805_IPC 1047.24,5628.55 r270 bottom locked
C59 "0.1UF" MC_S6/SM/C_0402_IPC 232.28,5286.03 r90 bottom locked
C60 "10uF" MC_S6/SM/C_0805_IPC 1043.31,5338 r270 bottom locked
C61 "0.1UF" MC_S6/SM/C_0402_IPC 1133.86,5561.62 r90 bottom locked
C62 "0.1UF" MC_S6/SM/C_0402_IPC 1708.66,5360.83 r90 bottom locked
C63 "0.1UF" MC_S6/SM/C_0402_IPC 1708.66,5557.68 r90 bottom locked
C64 "0.1UF" MC_S6/SM/C_0402_IPC 1708.66,5687.62 r90 bottom locked
C65 "10uF" MC_S6/SM/C_0805_IPC 1820.87,5357.68 r270 bottom locked
C66 "0.1UF" MC_S6/SM/C_0402_IPC 1133.86,5687.6 r90 bottom locked
C67 "0.1UF" MC_S6/SM/C_0402_IPC 1675.2,5457.29 r180 bottom locked
C68 "0.1UF" MC_S6/SM/C_0402_IPC 1133.86,5415.95 r270 bottom locked
C69 "10uF" MC_S6/SM/C_0805_IPC 141.73,5628.55 r270 bottom locked
C70 "0.1UF" MC_S6/SM/C_0402_IPC 1133.86,5265.16 r90 bottom locked
C71 "10uF" MC_S6/SM/C_0805_IPC 137.8,5338 r270 bottom locked
C72 "0.1UF" MC_S6/SM/C_0402_IPC 704.72,5557.68 r90 bottom locked
C73 "0.1UF" MC_S6/SM/C_0402_IPC 433.07,5298.63 r270 bottom locked
C74 "0.1UF" MC_S6/SM/C_0402_IPC 1240.16,5415.95 r270 bottom locked
C75 "0.1UF" MC_S6/SM/C_0402_IPC 2017.72,5318.31 r0 bottom
C76 "0.1UF" MC_S6/SM/C_0402_IPC 2972.44,5267.13 r90 bottom locked
C77 "0.1uF" MC_S6/SM/C_0402_IPC 2962.6,5692.33 r180 bottom locked
C78 "0.47uF" MC_S6/SM/C_0402_IPC 2017.72,5446.27 r0 bottom
C80 "0.01uF" MC_S6/SM/C_0603_IPC 3917.32,5318.31 r270 top
C81 "0.01uF" MC_S6/SM/C_0603_IPC 3848.43,5318.31 r270 top
C82 "10uF" MC_S6/SM/C_0805_IPC 3877.95,5652.96 r180 bottom locked
C83 "0.47uF" MC_S6/SM/C_0402_IPC 3877.95,5566.34 r180 bottom locked
C84 "0.01uF" MC_S6/SM/C_0402_IPC 4003.94,5713.98 r90 bottom locked
C85 "0.01uF" MC_S6/SM/C_0402_IPC 4003.94,5603.75 r270 bottom locked
C86 "100uF" MC_S6/SM/C_1210_IPC 2826.77,3725.01 r0 top locked
C87 "100uF" MC_S6/SM/C_1210_IPC 2826.77,3252.56 r0 top locked
C88 "4.7uF" MC_S6/SM/C_0603_IPC 2787.34,3017.13 r0 top locked
C89 "4.7uF" MC_S6/SM/C_0603_IPC 2787.34,3489.57 r0 top locked
C90 "10uF" MC_S6/SM/C_0805_IPC 2933.07,3487.6 r90 top locked
C91 "0.22uF" MC_S6/SM/C_0402_IPC 2770.65,3147.05 r0 top locked
C92 "0.22uF" MC_S6/SM/C_0402_IPC 2770.65,3363.59 r0 top locked
C93 "0.22uF" MC_S6/SM/C_0402_IPC 2770.65,3418.71 r0 top locked
C94 "0.22uF" MC_S6/SM/C_0402_IPC 2535.43,3251.38 r180 top locked
C95 "0.22uF" MC_S6/SM/C_0402_IPC 2770.65,3084.06 r0 top locked
C96 "0.22uF" MC_S6/SM/C_0402_IPC 2618.11,3330.12 r180 top locked
C97 "0.01uF" MC_S6/SM/C_0603_IPC 3720.47,5318.31 r270 top
C98 "0.01uF" MC_S6/SM/C_0603_IPC 3661.42,5318.31 r270 top
C99 "10uF" MC_S6/SM/C_0805_IPC 3435.04,5780.91 r180 bottom
C100 "10uF" MC_S6/SM/C_0805_IPC 3090.55,692.13 r0 top locked
C101 "0.47uF" MC_S6/SM/C_0402_IPC 3090.55,770.87 r0 top locked
C102 "100uF" MC_S6/SM/C_1210_IPC 2549.21,820.08 r90 bottom locked
C103 "10uF" MC_S6/SM/C_0805_IPC 2381.89,820.08 r90 bottom locked
C104 "0.47uF" MC_S6/SM/C_0603_IPC 2263.78,820.08 r90 bottom locked
C105 "0.1uF" MC_S6/SM/C_0402_IPC 1751.97,692.13 r90 bottom locked
C106 "0.01uF" MC_S6/SM/C_0402_IPC 1870.08,692.13 r90 bottom locked
C107 "4.7uF" MC_S6/SM/C_0603_IPC 787.4,1504.14 r270 top locked
C108 "0.47uF" MC_S6/SM/C_0603_IPC 866.14,1504.14 r90 top locked
C109 "0.1uF" MC_S6/SM/C_0402_IPC 1742.13,1504.14 r270 top
C110 "10uF" MC_S6/SM/C_0805_IPC 3090.55,593.71 r0 top locked
C111 "0.47uF" MC_S6/SM/C_0402_IPC 3090.55,505.12 r0 top locked
C112 "100uF" MC_S6/SM/C_1210_IPC 2549.21,441.15 r270 bottom locked
C113 "10uF" MC_S6/SM/C_0805_IPC 2381.89,441.15 r270 bottom locked
C114 "0.47uF" MC_S6/SM/C_0603_IPC 2263.78,441.15 r270 bottom locked
C115 "0.1uF" MC_S6/SM/C_0402_IPC 1870.08,593.71 r270 bottom locked
C116 "0.01uF" MC_S6/SM/C_0402_IPC 1751.97,593.71 r270 bottom locked
C117 "0.47uF" MC_S6/SM/C_0603_IPC 482.28,1514.77 r90 top
C118 "0.47uF" MC_S6/SM/C_0603_IPC 610.24,1691.15 r0 top
C119 "0.47uF" MC_S6/SM/C_0402_IPC 3435.04,5702.17 r180 bottom
C120 "4.7uF" MC_S6/SM/C_0603_IPC 1811.02,4225.79 r180 top locked
C121 "4.7uF" MC_S6/SM/C_0603_IPC 994.09,3290.75 r0 top locked
C122 "4.7uF" MC_S6/SM/C_0603_IPC 994.09,2492.72 r0 top locked
C123 "4.7uF" MC_S6/SM/C_0603_IPC 994.09,4142.59 r0 top locked
C124 "4.7uF" MC_S6/SM/C_0603_IPC 994.09,3212.01 r0 top locked
C125 "4.7uF" MC_S6/SM/C_0603_IPC 994.09,2424.09 r0 top locked
C126 "4.7uF" MC_S6/SM/C_0603_IPC 1574.8,2276.97 r180 top locked
C127 "4.7uF" MC_S6/SM/C_0603_IPC 1811.02,2276.97 r180 top locked
C128 "4.7uF" MC_S6/SM/C_0603_IPC 2519.68,2276.97 r0 top locked
C129 "4.7uF" MC_S6/SM/C_0603_IPC 994.09,2355.45 r0 top locked
C130 "4.7uF" MC_S6/SM/C_0603_IPC 3100.39,2493.51 r180 top locked
C131 "4.7uF" MC_S6/SM/C_0603_IPC 3100.39,2355.71 r180 top locked
C132 "4.7uF" MC_S6/SM/C_0603_IPC 3102.36,4075.92 r180 top locked
C133 "0.01uF" MC_S6/SM/C_0402_IPC 3435.04,5652.96 r180 bottom
C134 "4.7uF" MC_S6/SM/C_0603_IPC 3100.39,3292.72 r180 top locked
C135 "4.7uF" MC_S6/SM/C_0603_IPC 2283.46,2276.97 r180 top locked
C136 "4.7uF" MC_S6/SM/C_0603_IPC 3102.36,4142.59 r180 top locked
C137 "4.7uF" MC_S6/SM/C_0603_IPC 3100.39,3213.98 r180 top locked
C138 "4.7uF" MC_S6/SM/C_0603_IPC 3100.39,2424.61 r180 top locked
C139 "4.7uF" MC_S6/SM/C_0603_IPC 994.09,4009.26 r0 top locked
C140 "4.7uF" MC_S6/SM/C_0603_IPC 2283.46,4235.64 r180 top locked
C141 "4.7uF" MC_S6/SM/C_0603_IPC 3102.36,4009.26 r180 top locked
C142 "4.7uF" MC_S6/SM/C_0603_IPC 994.09,4209.26 r0 top locked
C143 "4.7uF" MC_S6/SM/C_0603_IPC 994.09,4075.92 r0 top locked
C144 "4.7uF" MC_S6/SM/C_0603_IPC 3102.36,4209.26 r180 top locked
C145 "0.01uF" MC_S6/SM/C_0402_IPC 3435.04,5603.75 r180 bottom
C146 "10uF" MC_S6/SM/C_0805_IPC 3415.35,5338 r270 bottom
C147 "0.47uF" MC_S6/SM/C_0402_IPC 3336.61,5338 r270 bottom
C148 "0.01uF" MC_S6/SM/C_0402_IPC 3287.4,5338 r270 bottom
C201 "0.47UF" MC_S6/SM/C_0402_IPC 1325.8,3147.05 r180 top locked
C202 "0.47UF" MC_S6/SM/C_0402_IPC 1624.02,3251.38 r180 top locked
C203 "0.47UF" MC_S6/SM/C_0402_IPC 2157.48,2529.94 r270 top locked
C204 "0.47uF" MC_S6/SM/C_0402_IPC 2216.54,2529.94 r270 top locked
C205 "0.47uF" MC_S6/SM/C_0402_IPC 1879.92,3976.04 r90 top locked
C211 "0.47UF" MC_S6/SM/C_0402_IPC 2027.56,3684.45 r180 top locked
C212 "0.47UF" MC_S6/SM/C_0402_IPC 2244.09,3251.38 r180 top locked
C213 "0.47UF" MC_S6/SM/C_0402_IPC 1325.8,3615.56 r180 top locked
C214 "0.47uF" MC_S6/SM/C_0402_IPC 2770.65,3615.56 r0 top locked
C215 "0.47uF" MC_S6/SM/C_0402_IPC 2214.57,3976.04 r90 top locked
C221 "0.47UF" MC_S6/SM/C_0402_IPC 1801.18,3251.38 r180 top locked
C222 "0.47UF" MC_S6/SM/C_0402_IPC 2066.93,3802.56 r0 top locked
C223 "0.47UF" MC_S6/SM/C_0402_IPC 2047.24,3566.34 r90 top locked
C224 "0.47uF" MC_S6/SM/C_0402_IPC 1877.95,2529.94 r270 top locked
C225 "0.47uF" MC_S6/SM/C_0402_IPC 1325.8,3084.06 r180 top locked
C231 "0.47UF" MC_S6/SM/C_0402_IPC 1937.01,2529.94 r270 top locked
C232 "0.47UF" MC_S6/SM/C_0402_IPC 1850.39,2690.36 r270 top locked
C233 "0.47UF" MC_S6/SM/C_0402_IPC 1685.04,2529.94 r270 top locked
C234 "0.47uF" MC_S6/SM/C_0402_IPC 1325.8,2950.2 r180 top locked
C235 "0.47uF" MC_S6/SM/C_0402_IPC 2770.65,2887.21 r0 top locked
C241 "0.47UF" MC_S6/SM/C_0402_IPC 2413.39,2529.94 r270 top locked
C242 "0.47UF" MC_S6/SM/C_0402_IPC 2027.56,2700.2 r180 top locked
C243 "0.47uF" MC_S6/SM/C_0402_IPC 1325.8,3552.56 r180 top locked
C244 "0.47uF" MC_S6/SM/C_0402_IPC 2770.65,3556.5 r0 top locked
C251 "0.47UF" MC_S6/SM/C_0402_IPC 2157.48,3976.04 r90 top locked
C252 "0.47UF" MC_S6/SM/C_0402_IPC 2618.11,2897.05 r0 top locked
C253 "0.47uF" MC_S6/SM/C_0402_IPC 2770.65,2946.27 r0 top locked
C254 "0.47uF" MC_S6/SM/C_0402_IPC 2350.39,2529.94 r270 top locked
C261 "0.47uF" MC_S6/SM/C_0402_IPC 1515.75,2975.79 r180 top
C262 "0.47uF" MC_S6/SM/C_0402_IPC 2047.24,2985.64 r270 top locked
C263 "0.47UF" MC_S6/SM/C_0402_IPC 2047.24,3438.39 r270 top locked
C264 "0.47UF" MC_S6/SM/C_0402_IPC 2047.24,3074.22 r90 top locked
C265 "0.47uF" MC_S6/SM/C_0402_IPC 1889.76,3251.38 r180 top locked
C266 "0.47uF" MC_S6/SM/C_0402_IPC 1325.8,2887.21 r180 top locked
C267 "0.47uF" MC_S6/SM/C_0402_IPC 2322.83,3251.38 r0 top locked
C268 "0.47uF" MC_S6/SM/C_0402_IPC 1744.09,2529.94 r270 top locked
C271 "0.47UF" MC_S6/SM/C_0402_IPC 2086.61,3251.38 r180 top locked
C272 "0.47UF" MC_S6/SM/C_0402_IPC 1988.19,3251.38 r0 top locked
C273 "0.47UF" MC_S6/SM/C_0402_IPC 2047.24,3192.33 r90 top locked
C274 "0.47UF" MC_S6/SM/C_0402_IPC 2165.35,3251.38 r0 top locked
C275 "0.47uF" MC_S6/SM/C_0402_IPC 1325.8,3363.59 r180 top locked
C276 "0.47uF" MC_S6/SM/C_0402_IPC 1325.8,3422.64 r180 top locked
C301 "4.7UF" MC_S6/SM/C_0603_IPC 2787.34,2662.8 r0 top locked
C302 "10uF" MC_S6/SM/C_0805_IPC 1161.42,3487.6 r90 top locked
C311 "4.7UF" MC_S6/SM/C_0603_IPC 1456.69,3992.72 r90 top locked
C312 "10uF" MC_S6/SM/C_0805_IPC 1161.42,3015.16 r90 top locked
C321 "4.7UF" MC_S6/SM/C_0603_IPC 1811.02,3992.72 r90 top locked
C322 "10uF" MC_S6/SM/C_0805_IPC 1811.02,2365.56 r180 top locked
C331 "4.7UF" MC_S6/SM/C_0603_IPC 1456.69,2513.26 r270 top locked
C332 "10uF" MC_S6/SM/C_0805_IPC 2283.46,2365.56 r180 top locked
C341 "4.7UF" MC_S6/SM/C_0603_IPC 2637.8,2513.26 r270 top locked
C342 "10uF" MC_S6/SM/C_0805_IPC 2933.07,3015.16 r90 top locked
C351 "4.7UF" MC_S6/SM/C_0603_IPC 2637.8,3992.72 r90 top locked
C361 "4.7UF" MC_S6/SM/C_0603_IPC 1811.02,2513.26 r270 top locked
C362 "4.7UF" MC_S6/SM/C_0603_IPC 1309.12,3013.19 r180 top locked
C363 "4.7UF" MC_S6/SM/C_0603_IPC 1309.12,2662.8 r180 top locked
C364 "4.7UF" MC_S6/SM/C_0603_IPC 2787.34,3843.9 r0 top locked
C365 "10uF" MC_S6/SM/C_0805_IPC 1811.02,4137.21 r180 top locked
C371 "4.7UF" MC_S6/SM/C_0603_IPC 2283.46,3992.72 r90 top locked
C372 "4.7UF" MC_S6/SM/C_0603_IPC 2283.46,2513.26 r270 top locked
C373 "4.7UF" MC_S6/SM/C_0603_IPC 1309.12,3843.12 r180 top locked
C374 "4.7uF" MC_S6/SM/C_0603_IPC 1309.12,3489.57 r180 top locked
C375 "10uF" MC_S6/SM/C_0805_IPC 2283.46,4137.21 r180 top locked
C401 "100UF" MC_S6/SM/C_1210_IPC 2826.77,2780.12 r0 top locked
C411 "100UF" MC_S6/SM/C_1210_IPC 1574.8,4032.88 r90 top locked
C421 "100UF" MC_S6/SM/C_1210_IPC 1269.68,3252.56 r180 top locked
C431 "100UF" MC_S6/SM/C_1210_IPC 1574.8,2473.82 r270 top locked
C441 "100UF" MC_S6/SM/C_1210_IPC 2519.69,2473.82 r270 top locked
C451 "100UF" MC_S6/SM/C_1210_IPC 2519.69,4032.16 r90 top locked
C461 "100UF" MC_S6/SM/C_1210_IPC 1269.68,2780.91 r180 top locked
C462 "100UF" MC_S6/SM/C_1210_IPC 2047.24,4198.23 r90 top locked
C471 "100UF" MC_S6/SM/C_1210_IPC 1269.68,3725.79 r180 top locked
C472 "100UF" MC_S6/SM/C_1210_IPC 2047.24,2473.82 r270 top locked
CCLK "Test Point Via" MC_S6/TH/TPVIA 1338.58,5780.91 r0 top locked
CMPCSB "Test Point Via" MC_S6/TH/TPVIA 1732.29,3645.07 r270 top locked
CSB "Test Point Via" MC_S6/TH/TPVIA 1811.03,3723.82 r0 top locked
CSOB "Test Point Via" MC_S6/TH/TPVIA 1456.69,2857.68 r0 top locked
CT1 "220uF" MC_S6/SM/CT_2917_D 183.07,4760.05 r270 top
CT2 "220uF" MC_S6/SM/CT_2917_D 423.23,4763.19 r270 top
CT3 "220uF" MC_S6/SM/CT_2917_D 994.09,2899.02 r90 top locked
CT4 "220uF" MC_S6/SM/CT_2917_D 2814.96,4123.43 r90 top locked
CT5 "220uF" MC_S6/SM/CT_2917_D 994.09,3607.68 r270 top locked
CT6 "220uF" MC_S6/SM/CT_2917_D 3102.36,2898.23 r90 top locked
CT7 "220uF" MC_S6/SM/CT_2917_D 2893.7,633.08 r90 top locked
CT8 "220uF" MC_S6/SM/CT_2917_D 3679.13,4763.19 r270 top
CT9 "220uF" MC_S6/SM/CT_2917_D 3923.23,4763.98 r270 top
CT10 "220uF" MC_S6/SM/CT_2917_D 2814.96,2383.27 r270 top locked
CT11 "220uF" MC_S6/SM/CT_2917_D 1283.46,4119.49 r90 top locked
CT12 "220uF" MC_S6/SM/CT_2917_D 1279.53,2383.27 r270 top locked
CT13 "220uF" MC_S6/SM/CT_2917_D 3102.36,3606.9 r270 top locked
D1 "LTST-C193TBKT-5A" MC_S6/SM/LED_0603 1988.19,5613.59 r270 top
D2 "LTST-C193KGKT-5A" MC_S6/SM/LED_0603 1564.96,1504.14 r90 top locked
D40 "LTST-C193KRKT-5A" MC_S6/SM/LED_0603 1151.57,5141.15 r270 top
D41 "LTST-C193KRKT-5A" MC_S6/SM/LED_0603 2057.09,5613.59 r270 top
DONE "Test Point Via" MC_S6/TH/TPVIA 1653.54,5780.91 r0 top locked
DSN "Test Point Via" MC_S6/TH/TPVIA 2283.48,3487.6 r0 top locked
H1 "MEZSCREW" MC_S6/TH/SCREW_BASE 275,3250.01 r0 top locked
H2 "MEZSCREW" MC_S6/TH/SCREW_BASE 2050,4900.01 r0 top locked
H3 "MEZSCREW" MC_S6/TH/SCREW_BASE 2050,1525.01 r0 top locked
H4 "MEZSCREW" MC_S6/TH/SCREW_BASE 3825,3250.01 r0 top locked
H12 "MezScrewHS" MC_S6/TH/SCREW_PLATE 750,4550.01 r0 top locked
H31 "MezScrewHS" MC_S6/TH/SCREW_PLATE 750,1950.01 r0 top locked
H34 "MezScrewHS" MC_S6/TH/SCREW_PLATE 3350,1950.01 r0 top locked
H42 "MezScrewHS" MC_S6/TH/SCREW_PLATE 3350,4550.01 r0 top locked
INIT "Test Point Via" MC_S6/TH/TPVIA 1496.06,5780.91 r0 top locked
INITB "Test Point Via" MC_S6/TH/TPVIA 1811.03,3763.19 r0 top locked
J1 "VTTX" MC_S6/SM/TE-1888247-1 1722.05,633.08 r0 top locked
L3 "1uH" MC_S6/TH/DELEVAN1537 2415.79,823.9 r0 top locked
L4 "1uH" MC_S6/TH/DELEVAN1537 2415.79,443.9 r0 top locked
M1 "CS86717095B1" CS86717095B1 1309.06,633.08 r90 top locked
PCBM1 "CERN VTTX" "PCBM_CERN_VTTX V2.1" 1722.05,633.08 r0 top locked
PROGB "Test Point Via" MC_S6/TH/TPVIA 1181.1,5780.91 r0 top locked
R1 "1.2k" MC_S6/SM/R_0402_IPC 3326.77,480.32 r0 top locked
R2 "4.7k" MC_S6/SM/R_0603_IPC 3316.93,761.03 r0 top locked
R3 "300R" MC_S6/SM/R_0402_IPC 3326.77,421.27 r180 top locked
R4 "5.1k" MC_S6/SM/R_0402_IPC 492.13,3763.19 r90 top locked
R5 "4.7k" MC_S6/SM/R_0603_IPC 167.32,3763.19 r90 top locked
R6 "1.96k" MC_S6/SM/R_0402_IPC 551.18,3763.19 r270 top locked
R7 "1.8k" MC_S6/SM/R_0402_IPC 164.81,2749.42 r270 top locked
R8 "4.7k" MC_S6/SM/R_0603_IPC 499.46,2749.42 r270 top locked
R9 "1.3k" MC_S6/SM/R_0402_IPC 105.76,2749.42 r90 top locked
R10 "1.8k" MC_S6/SM/R_0402_IPC 3946.85,3773.04 r90 top locked
R11 "4.7k" MC_S6/SM/R_0603_IPC 3631.89,3763.19 r90 top locked
R12 "1.3k" MC_S6/SM/R_0402_IPC 4005.91,3773.04 r270 top locked
R13 "110R" MC_S6/SM/R_0402_IPC 2027.56,3841.93 r180 top locked
R14 "110R" MC_S6/SM/R_0402_IPC 1948.82,3841.93 r180 top locked
R15 "1.2k" MC_S6/SM/R_0402_IPC 3622.05,2749.41 r270 top
R16 "4.7k" MC_S6/SM/R_0603_IPC 3966.54,2749.41 r270 top
R17 "300R" MC_S6/SM/R_0402_IPC 3562.99,2749.57 r90 top
R20 "5.1K" MC_S6/SM/R_0402_IPC 2539.37,5731.7 r180 bottom locked
R21 "5.1k" MC_S6/SM/R_0402_IPC 2716.54,5623.43 r0 bottom locked
R22 "5.1K" MC_S6/SM/R_0402_IPC 2539.37,5672.64 r0 bottom locked
R23 "5.1k" MC_S6/SM/R_0402_IPC 2716.54,5544.69 r0 bottom locked
R24 "768R" MC_S6/SM/R_0402_IPC 2283.46,5436.42 r180 bottom locked
R25 "768R" MC_S6/SM/R_0402_IPC 2283.46,5347.84 r180 bottom locked
R26 "5.1K" MC_S6/SM/R_0402_IPC 2539.37,5347.84 r0 bottom locked
R27 "5.1k" MC_S6/SM/R_0402_IPC 2716.54,5475.79 r180 bottom
R28 "5.1k" MC_S6/SM/R_0402_IPC 2716.54,5416.74 r0 bottom
R40 "4.7k" MC_S6/SM/R_0603_IPC 704.72,5686.42 r90 bottom locked
R41 "10M" MC_S6/SM/C_0402_IPC 354.33,5298.63 r90 bottom locked
R42 "330R" MC_S6/SM/R_0603_IPC 1574.8,5672.64 r90 bottom locked
R43 "4.7K" MC_S6/SM/R_0603_IPC 1440.94,5674.61 r90 bottom locked
R44 "4.7K" MC_S6/SM/R_0603_IPC 1259.84,5674.61 r90 bottom locked
R45 "510R" MC_S6/SM/R_0603_IPC 2017.72,5387.21 r180 bottom
R46 "28R" MC_S6/SM/R_0603_IPC 1358.27,5564.38 r0 bottom locked
R47 "999G" MC_S6/SM/R_0603_IPC 1496.06,5564.38 r180 bottom locked
R48 "10M" MC_S6/SM/C_0402_IPC 1679.13,5260.44 r0 bottom locked
R49 "10M" MC_S6/SM/C_0402_IPC 773.62,5260.44 r0 bottom locked
R50 "0.0R" MC_S6/SM/R_0402_IPC 1685.04,3985.64 r90 top locked
R51 "0.0R" MC_S6/SM/R_0402_IPC 1744.09,3985.64 r90 top locked
R52 "0.0R" MC_S6/SM/R_0402_IPC 2350.39,3985.64 r90 top locked
R53 "0.0R" MC_S6/SM/R_0402_IPC 2413.39,3985.64 r90 top locked
R54 "10M" MC_S6/SM/C_0402_IPC 2047.24,2247.45 r270 top locked
R55 "4.7k" MC_S6/SM/R_0603_IPC 2885.83,5265.16 r90 bottom locked
R56 "110R" MC_S6/SM/R_0402_IPC 1496.06,3782.88 r270 top locked
R57 "110R" MC_S6/SM/R_0402_IPC 1446.85,3782.88 r90 top locked
R58 "510R" MC_S6/SM/R_0603_IPC 1427.17,5210.05 r0 bottom
R59 "510R" MC_S6/SM/R_0603_IPC 2017.72,5505.32 r0 bottom
R80 "49.9R" MC_S6/SM/R_0805_IPC 2980.32,3253.35 r270 top locked
R81 "4.7k" MC_S6/SM/R_0603_IPC 3877.95,5788.79 r0 bottom locked
R82 "4.7k" MC_S6/SM/R_0603_IPC 3602.36,5662.8 r90 bottom
R83 "4.7k" MC_S6/SM/R_0603_IPC 3415.35,5495.48 r90 bottom
R100 "187R" MC_S6/SM/R_0603_IPC 1024.41,1504.14 r90 top locked
R101 "4.7k" MC_S6/SM/R_0603_IPC 1418.11,1504.14 r270 top locked
R102 "187R" MC_S6/SM/R_0603_IPC 944.88,1504.14 r270 top locked
R103 "4.7k" MC_S6/SM/R_0603_IPC 1338.58,1504.14 r270 top locked
R104 "4.7k" MC_S6/SM/R_0603_IPC 1259.84,1504.14 r270 top locked
R105 "4.7k" MC_S6/SM/R_0603_IPC 1102.36,1504.14 r270 top locked
R106 "4.7k" MC_S6/SM/R_0603_IPC 1181.1,1504.14 r270 top locked
R107 "330R" MC_S6/SM/R_0603_IPC 1491.14,1504.14 r90 top locked
R108 "4.7k" MC_S6/SM/R_0603_IPC 708.66,1504.14 r270 top
SP1 "Stiffener Plate" MC_S6/SPLATE 4098.43,1221.07 r180 bottom locked
T1 "Tie" MC_S6/TH/TIE_VIA 2982.28,3330.12 r90 top locked net-tie
TCK "Test Point Via" MC_S6/TH/TPVIA 314.96,5091.93 r0 top
TDI "Test Point Via" MC_S6/TH/TPVIA 541.34,5091.93 r0 top
TDO "Test Point Via" MC_S6/TH/TPVIA 757.87,5091.93 r0 top
TDOF "Test Point Via" MC_S6/TH/TPVIA 2362.21,3645.07 r0 top locked
TDOP "Test Point Via" MC_S6/TH/TPVIA 68.9,5338 r0 top locked
TMS "Test Point Via" MC_S6/TH/TPVIA 88.58,5091.93 r0 top
TPG1 "GND" MC_S6/TH/TPGND 750,4906.11 r0 top locked
TPG2 "GND" MC_S6/TH/TPGND 3350,4906.11 r0 top locked
TPG3 "GND" MC_S6/TH/TPGND 3825,1950.01 r0 top locked
TPG4 "GND" MC_S6/TH/TPGND 275,1950.01 r0 top locked
TTCCLK "Test Point Via" MC_S6/TH/TPVIA 1929.14,3723.82 r270 top locked
U1 "XC6SLX150T-3FGG900C" MC_S6/BGA/FGG900 2047.24,3251.38 r90 bottom locked
U2 "XCF32PVOG48C" MC_S6/SM/VOG48 1425.2,5486.82 r0 top locked
U3 "XCF08PVOG48C" MC_S6/SM/VOG48 519.69,5486.82 r0 top locked
U4 "74LVC161PW,118" MC_S6/SM/TSSOP16 1440.94,5387.21 r180 bottom locked
U5 "DS1233AZ-10+" MC_S6/SM/SOT223_1243 472.44,5584.06 r90 bottom locked
U6 "SN74LVC1G07-EP" MC_S6/SM/SOT_SC70_DCK5 561.02,5298.63 r180 bottom locked
U7 "SN74LVC1T45DCKR" MC_S6/SM/SOT_SC70_DCK6 629.27,5131.3 r0 top locked
U8 "SN74LVC1T45DCKR" MC_S6/SM/SOT_SC70_DCK6 409.45,5131.3 r0 top locked
U9 "SN74LVC1T45DCKR" MC_S6/SM/SOT_SC70_DCK6 187.01,5131.3 r0 top locked
U10 "SN74LVC1T45DCKR" MC_S6/SM/SOT_SC70_DCK6 849.08,5131.3 r0 top locked
U11 "DS2401Z" MC_S6/SM/SOT223_1243 2972.44,5328.16 r0 top locked
U12 "MIC69502WR" MC_S6/SM/SPAK7 3788.58,2455.71 r270 top
U13 "MIC69502WR" MC_S6/SM/SPAK7 328.74,4061.62 r90 top locked
U14 "MIC69502WR" MC_S6/SM/SPAK7 329.77,2455.71 r270 top locked
U15 "TLV2543CDB" MC_S6/SM/ADC_DB20 2401.57,5615.56 r0 top locked
U16 "LT1634ACS8-2.5" MC_S6/SM/LT1634_SOIC8 2401.57,5338 r0 top locked
U17 "SN74LVC1G34" MC_S6/SM/SOT_553_DRL5 2017.72,5349.81 r180 top locked
U18 "TMP36GRTZ" MC_S6/SM/SOT23_RJ5 2045.28,3981.7 r0 top locked
U19 "TMP36GRTZ" MC_S6/SM/SOT23_RJ5 2045.28,3982.68 r0 bottom locked
U20 "MIC69502WR" MC_S6/SM/SPAK7 3659.84,635.44 r0 top locked
U21 "MIC69502WR" MC_S6/SM/SPAK7 3788.58,4056.9 r90 top locked
U40 "74AUP1G04GW" SOT353-1 2017.72,5465.95 r180 top
U80 "DS90LV047ATMTCX/NOPB" MC_S6/SM/TSSOP16 3425.2,5328.16 r0 top locked
U100 "SN74LVC1G07-EP" MC_S6/SM/SOT_SC70_DCK5 1663.39,1504.14 r90 top
U101 "74LVC2T45DC,125" "VSSOP8 SOT765-1" 610.24,1504.14 r90 top
VCORE "Test Point Via" MC_S6/TH/TPVIA 364.17,5780.91 r0 top locked
VREF "Test Point Via" MC_S6/TH/TPVIA 2618.11,5357.68 r0 top locked
WRITEB "Test Point Via" MC_S6/TH/TPVIA 1850.39,3684.45 r0 top locked
X1 "SG3225VAN 80.000000M-KEGA3" MC_S6/SM/XTAL-LVDS-3.2-2.5 3877.17,5659.85 r270 top locked
X2 "ASV-33.000MHZ-EJ-T" MC_S6/SM/XTAL-7X5.08 2972.44,5672.64 r180 top locked
X3 "CFPS-73 80.0 MHz" MC_S6/SM/XTAL-7X5.08 3425.2,5672.64 r180 top
XP1 "Samtec_XP1" MC_S6/TH/SAMTEC_MOLC_40X4 675,4225.01 r270 bottom locked
XP2 "Samtec_XP2" MC_S6/TH/SAMTEC_MOLC_40X4 1075,4350.01 r0 bottom locked
XP3 "Samtec_XP3" MC_S6/TH/SAMTEC_MOLC_40X4 1075,1925.01 r0 bottom locked
XP4 "Samtec_XP4" MC_S6/TH/SAMTEC_MOLC_40X4 3275,4225.01 r270 bottom locked
ZI1 "Fiducial Dot" MC_S6/SM/FIDUCIAL_DOT 994.09,2582.09 r0 top locked
ZI2 "Fiducial Dot" MC_S6/SM/FIDUCIAL_DOT 1043.31,5170.67 r0 top locked
ZI3 "Fiducial Dot" MC_S6/SM/FIDUCIAL_DOT 3346.46,5101.78 r0 top locked
ZI4 "Fiducial Dot" MC_S6/SM/FIDUCIAL_DOT 1368.11,2572.25 r0 bottom locked
ZI5 "Fiducial Dot" MC_S6/SM/FIDUCIAL_DOT 1368.11,3930.52 r0 bottom locked
ZI6 "Fiducial Dot" MC_S6/SM/FIDUCIAL_DOT 2726.38,3930.52 r0 bottom locked
ZI7 "Fiducial Dot" MC_S6/SM/FIDUCIAL_DOT 994.09,3920.67 r0 top locked
ZI8 "Fiducial Dot" MC_S6/SM/FIDUCIAL_DOT 598.03,1263 r0 top locked
ZI9 "Fiducial Dot" MC_S6/SM/FIDUCIAL_DOT 3326.77,918.51 r0 top locked
ZI10 "Fiducial Dot" MC_S6/SM/FIDUCIAL_DOT 3125.98,5190.36 r90 bottom locked
ZI11 "Fiducial Dot" MC_S6/SM/FIDUCIAL_DOT 1043.31,5170.67 r180 bottom locked
ZI12 "Fiducial Dot" MC_S6/SM/FIDUCIAL_DOT 3100.39,2591.93 r90 top locked

## Footprints (in the part's own frame and the unit in brackets; to place one, negate y for a bottom-side part, rotate by r counter-clockwise, add the part's x,y. Pads: shape width x height; smd on the part's side, far side on the other; paste and mask are expansions set on the pad)
CS86717095B1 [mm]
  round 4 / inner round 4 / far side round 5 hole 3: 1(-12,5) 2(12,-5)
  body extent -15.52,-8.61 15.48,8.39, height 17.24
MC_S6/BGA/FGG900 [mm]
  round 0.4 smd mask+0.05: A1(-14.5,14.5) A2(-13.5,14.5) A3(-12.5,14.5) A4(-11.5,14.5) A5(-10.5,14.5) A6(-9.5,14.5) A7(-8.5,14.5) A8(-7.5,14.5) A9(-6.5,14.5) A10(-5.5,14.5) A11(-4.5,14.5) A12(-3.5,14.5) A13(-2.5,14.5) A14(-1.5,14.5) A15(-0.5,14.5) A16(0.5,14.5) A17(1.5,14.5) A18(2.5,14.5) A19(3.5,14.5) A20(4.5,14.5) A21(5.5,14.5) A22(6.5,14.5) A23(7.5,14.5) A24(8.5,14.5) A25(9.5,14.5) A26(10.5,14.5) A27(11.5,14.5) A28(12.5,14.5) A29(13.5,14.5) A30(14.5,14.5) AA1(-14.5,-5.5) AA2(-13.5,-5.5) AA3(-12.5,-5.5) AA4(-11.5,-5.5) AA5(-10.5,-5.5) AA6(-9.5,-5.5) AA7(-8.5,-5.5) AA8(-7.5,-5.5) AA9(-6.5,-5.5) AA10(-5.5,-5.5) AA11(-4.5,-5.5) AA12(-3.5,-5.5) AA13(-2.5,-5.5) AA14(-1.5,-5.5) AA15(-0.5,-5.5) AA16(0.5,-5.5) AA17(1.5,-5.5) AA18(2.5,-5.5) AA19(3.5,-5.5) AA20(4.5,-5.5) AA21(5.5,-5.5) AA22(6.5,-5.5) AA23(7.5,-5.5) AA24(8.5,-5.5) AA25(9.5,-5.5) AA26(10.5,-5.5) AA27(11.5,-5.5) AA28(12.5,-5.5) AA29(13.5,-5.5) AA30(14.5,-5.5) AB1(-14.5,-6.5) AB2(-13.5,-6.5) AB3(-12.5,-6.5) AB4(-11.5,-6.5) AB5(-10.5,-6.5) AB6(-9.5,-6.5) AB7(-8.5,-6.5) AB8(-7.5,-6.5) AB9(-6.5,-6.5) AB10(-5.5,-6.5) AB11(-4.5,-6.5) AB12(-3.5,-6.5) AB13(-2.5,-6.5) AB14(-1.5,-6.5) AB15(-0.5,-6.5) AB16(0.5,-6.5) AB17(1.5,-6.5) AB18(2.5,-6.5) AB19(3.5,-6.5) AB20(4.5,-6.5) AB21(5.5,-6.5) AB22(6.5,-6.5) AB23(7.5,-6.5) AB24(8.5,-6.5) AB25(9.5,-6.5) AB26(10.5,-6.5) AB27(11.5,-6.5) AB28(12.5,-6.5) AB29(13.5,-6.5) AB30(14.5,-6.5) AC1(-14.5,-7.5) AC2(-13.5,-7.5) AC3(-12.5,-7.5) AC4(-11.5,-7.5) AC5(-10.5,-7.5) AC6(-9.5,-7.5) AC7(-8.5,-7.5) AC8(-7.5,-7.5) AC9(-6.5,-7.5) AC10(-5.5,-7.5) AC11(-4.5,-7.5) AC12(-3.5,-7.5) AC13(-2.5,-7.5) AC14(-1.5,-7.5) AC15(-0.5,-7.5) AC16(0.5,-7.5) AC17(1.5,-7.5) AC18(2.5,-7.5) AC19(3.5,-7.5) AC20(4.5,-7.5) AC21(5.5,-7.5) AC22(6.5,-7.5) AC23(7.5,-7.5) AC24(8.5,-7.5) AC25(9.5,-7.5) AC26(10.5,-7.5) AC27(11.5,-7.5) AC28(12.5,-7.5) AC29(13.5,-7.5) AC30(14.5,-7.5) AD1(-14.5,-8.5) AD2(-13.5,-8.5) AD3(-12.5,-8.5) AD4(-11.5,-8.5) AD5(-10.5,-8.5) AD6(-9.5,-8.5) AD7(-8.5,-8.5) AD8(-7.5,-8.5) AD9(-6.5,-8.5) AD10(-5.5,-8.5) AD11(-4.5,-8.5) AD12(-3.5,-8.5) AD13(-2.5,-8.5) AD14(-1.5,-8.5) AD15(-0.5,-8.5) AD16(0.5,-8.5) AD17(1.5,-8.5) AD18(2.5,-8.5) AD19(3.5,-8.5) AD20(4.5,-8.5) AD21(5.5,-8.5) AD22(6.5,-8.5) AD23(7.5,-8.5) AD24(8.5,-8.5) AD25(9.5,-8.5) AD26(10.5,-8.5) AD27(11.5,-8.5) AD28(12.5,-8.5) AD29(13.5,-8.5) AD30(14.5,-8.5) AE1(-14.5,-9.5) AE2(-13.5,-9.5) AE3(-12.5,-9.5) AE4(-11.5,-9.5) AE5(-10.5,-9.5) AE6(-9.5,-9.5) AE7(-8.5,-9.5) AE8(-7.5,-9.5) AE9(-6.5,-9.5) AE10(-5.5,-9.5) AE11(-4.5,-9.5) AE12(-3.5,-9.5) AE13(-2.5,-9.5) AE14(-1.5,-9.5) AE15(-0.5,-9.5) AE16(0.5,-9.5) AE17(1.5,-9.5) AE18(2.5,-9.5) AE19(3.5,-9.5) AE20(4.5,-9.5) AE21(5.5,-9.5) AE22(6.5,-9.5) AE23(7.5,-9.5) AE24(8.5,-9.5) AE25(9.5,-9.5) AE26(10.5,-9.5) AE27(11.5,-9.5) AE28(12.5,-9.5) AE29(13.5,-9.5) AE30(14.5,-9.5) AF1(-14.5,-10.5) AF2(-13.5,-10.5) AF3(-12.5,-10.5) AF4(-11.5,-10.5) AF5(-10.5,-10.5) AF6(-9.5,-10.5) AF7(-8.5,-10.5) AF8(-7.5,-10.5) AF9(-6.5,-10.5) AF10(-5.5,-10.5) AF11(-4.5,-10.5) AF12(-3.5,-10.5) AF13(-2.5,-10.5) AF14(-1.5,-10.5) AF15(-0.5,-10.5) AF16(0.5,-10.5) AF17(1.5,-10.5) AF18(2.5,-10.5) AF19(3.5,-10.5) AF20(4.5,-10.5) AF21(5.5,-10.5) AF22(6.5,-10.5) AF23(7.5,-10.5) AF24(8.5,-10.5) AF25(9.5,-10.5) AF26(10.5,-10.5) AF27(11.5,-10.5) AF28(12.5,-10.5) AF29(13.5,-10.5) AF30(14.5,-10.5) AG1(-14.5,-11.5) AG2(-13.5,-11.5) AG3(-12.5,-11.5) AG4(-11.5,-11.5) AG5(-10.5,-11.5) AG6(-9.5,-11.5) AG7(-8.5,-11.5) AG8(-7.5,-11.5) AG9(-6.5,-11.5) AG10(-5.5,-11.5) AG11(-4.5,-11.5) AG12(-3.5,-11.5) AG13(-2.5,-11.5) AG14(-1.5,-11.5) AG15(-0.5,-11.5) AG16(0.5,-11.5) AG17(1.5,-11.5) AG18(2.5,-11.5) AG19(3.5,-11.5) AG20(4.5,-11.5) AG21(5.5,-11.5) AG22(6.5,-11.5) AG23(7.5,-11.5) AG24(8.5,-11.5) AG25(9.5,-11.5) AG26(10.5,-11.5) AG27(11.5,-11.5) AG28(12.5,-11.5) AG29(13.5,-11.5) AG30(14.5,-11.5) AH1(-14.5,-12.5) AH2(-13.5,-12.5) AH3(-12.5,-12.5) AH4(-11.5,-12.5) AH5(-10.5,-12.5) AH6(-9.5,-12.5) AH7(-8.5,-12.5) AH8(-7.5,-12.5) AH9(-6.5,-12.5) AH10(-5.5,-12.5) AH11(-4.5,-12.5) AH12(-3.5,-12.5) AH13(-2.5,-12.5) AH14(-1.5,-12.5) AH15(-0.5,-12.5) AH16(0.5,-12.5) AH17(1.5,-12.5) AH18(2.5,-12.5) AH19(3.5,-12.5) AH20(4.5,-12.5) AH21(5.5,-12.5) AH22(6.5,-12.5) AH23(7.5,-12.5) AH24(8.5,-12.5) AH25(9.5,-12.5) AH26(10.5,-12.5) AH27(11.5,-12.5) AH28(12.5,-12.5) AH29(13.5,-12.5) AH30(14.5,-12.5) AJ1(-14.5,-13.5) AJ2(-13.5,-13.5) AJ3(-12.5,-13.5) AJ4(-11.5,-13.5) AJ5(-10.5,-13.5) AJ6(-9.5,-13.5) AJ7(-8.5,-13.5) AJ8(-7.5,-13.5) AJ9(-6.5,-13.5) AJ10(-5.5,-13.5) AJ11(-4.5,-13.5) AJ12(-3.5,-13.5) AJ13(-2.5,-13.5) AJ14(-1.5,-13.5) AJ15(-0.5,-13.5) AJ16(0.5,-13.5) AJ17(1.5,-13.5) AJ18(2.5,-13.5) AJ19(3.5,-13.5) AJ20(4.5,-13.5) AJ21(5.5,-13.5) AJ22(6.5,-13.5) AJ23(7.5,-13.5) AJ24(8.5,-13.5) AJ25(9.5,-13.5) AJ26(10.5,-13.5) AJ27(11.5,-13.5) AJ28(12.5,-13.5) AJ29(13.5,-13.5) AJ30(14.5,-13.5) AK1(-14.5,-14.5) AK2(-13.5,-14.5) AK3(-12.5,-14.5) AK4(-11.5,-14.5) AK5(-10.5,-14.5) AK6(-9.5,-14.5) AK7(-8.5,-14.5) AK8(-7.5,-14.5) AK9(-6.5,-14.5) AK10(-5.5,-14.5) AK11(-4.5,-14.5) AK12(-3.5,-14.5) AK13(-2.5,-14.5) AK14(-1.5,-14.5) AK15(-0.5,-14.5) AK16(0.5,-14.5) AK17(1.5,-14.5) AK18(2.5,-14.5) AK19(3.5,-14.5) AK20(4.5,-14.5) AK21(5.5,-14.5) AK22(6.5,-14.5) AK23(7.5,-14.5) AK24(8.5,-14.5) AK25(9.5,-14.5) AK26(10.5,-14.5) AK27(11.5,-14.5) AK28(12.5,-14.5) AK29(13.5,-14.5) AK30(14.5,-14.5) B1(-14.5,13.5) B2(-13.5,13.5) B3(-12.5,13.5) B4(-11.5,13.5) B5(-10.5,13.5) B6(-9.5,13.5) B7(-8.5,13.5) B8(-7.5,13.5) B9(-6.5,13.5) B10(-5.5,13.5) B11(-4.5,13.5) B12(-3.5,13.5) B13(-2.5,13.5) B14(-1.5,13.5) B15(-0.5,13.5) B16(0.5,13.5) B17(1.5,13.5) B18(2.5,13.5) B19(3.5,13.5) B20(4.5,13.5) B21(5.5,13.5) B22(6.5,13.5) B23(7.5,13.5) B24(8.5,13.5) B25(9.5,13.5) B26(10.5,13.5) B27(11.5,13.5) B28(12.5,13.5) B29(13.5,13.5) B30(14.5,13.5) C1(-14.5,12.5) C2(-13.5,12.5) C3(-12.5,12.5) C4(-11.5,12.5) C5(-10.5,12.5) C6(-9.5,12.5) C7(-8.5,12.5) C8(-7.5,12.5) C9(-6.5,12.5) C10(-5.5,12.5) C11(-4.5,12.5) C12(-3.5,12.5) C13(-2.5,12.5) C14(-1.5,12.5) C15(-0.5,12.5) C16(0.5,12.5) C17(1.5,12.5) C18(2.5,12.5) C19(3.5,12.5) C20(4.5,12.5) C21(5.5,12.5) C22(6.5,12.5) C23(7.5,12.5) C24(8.5,12.5) C25(9.5,12.5) C26(10.5,12.5) C27(11.5,12.5) C28(12.5,12.5) C29(13.5,12.5) C30(14.5,12.5) D1(-14.5,11.5) D2(-13.5,11.5) D3(-12.5,11.5) D4(-11.5,11.5) D5(-10.5,11.5) D6(-9.5,11.5) D7(-8.5,11.5) D8(-7.5,11.5) D9(-6.5,11.5) D10(-5.5,11.5) D11(-4.5,11.5) D12(-3.5,11.5) D13(-2.5,11.5) D14(-1.5,11.5) D15(-0.5,11.5) D16(0.5,11.5) D17(1.5,11.5) D18(2.5,11.5) D19(3.5,11.5) D20(4.5,11.5) D21(5.5,11.5) D22(6.5,11.5) D23(7.5,11.5) D24(8.5,11.5) D25(9.5,11.5) D26(10.5,11.5) D27(11.5,11.5) D28(12.5,11.5) D29(13.5,11.5) D30(14.5,11.5) E1(-14.5,10.5) E2(-13.5,10.5) E3(-12.5,10.5) E4(-11.5,10.5) E5(-10.5,10.5) E6(-9.5,10.5) E7(-8.5,10.5) E8(-7.5,10.5) E9(-6.5,10.5) E10(-5.5,10.5) E11(-4.5,10.5) E12(-3.5,10.5) E13(-2.5,10.5) E14(-1.5,10.5) E15(-0.5,10.5) E16(0.5,10.5) E17(1.5,10.5) E18(2.5,10.5) E19(3.5,10.5) E20(4.5,10.5) E21(5.5,10.5) E22(6.5,10.5) E23(7.5,10.5) E24(8.5,10.5) E25(9.5,10.5) E26(10.5,10.5) E27(11.5,10.5) E28(12.5,10.5) E29(13.5,10.5) E30(14.5,10.5) F1(-14.5,9.5) F2(-13.5,9.5) F3(-12.5,9.5) F4(-11.5,9.5) F5(-10.5,9.5) F6(-9.5,9.5) F7(-8.5,9.5) F8(-7.5,9.5) F9(-6.5,9.5) F10(-5.5,9.5) F11(-4.5,9.5) F12(-3.5,9.5) F13(-2.5,9.5) F14(-1.5,9.5) F15(-0.5,9.5) F16(0.5,9.5) F17(1.5,9.5) F18(2.5,9.5) F19(3.5,9.5) F20(4.5,9.5) F21(5.5,9.5) F22(6.5,9.5) F23(7.5,9.5) F24(8.5,9.5) F25(9.5,9.5) F26(10.5,9.5) F27(11.5,9.5) F28(12.5,9.5) F29(13.5,9.5) F30(14.5,9.5) G1(-14.5,8.5) G2(-13.5,8.5) G3(-12.5,8.5) G4(-11.5,8.5) G5(-10.5,8.5) G6(-9.5,8.5) G7(-8.5,8.5) G8(-7.5,8.5) G9(-6.5,8.5) G10(-5.5,8.5) G11(-4.5,8.5) G12(-3.5,8.5) G13(-2.5,8.5) G14(-1.5,8.5) G15(-0.5,8.5) G16(0.5,8.5) G17(1.5,8.5) G18(2.5,8.5) G19(3.5,8.5) G20(4.5,8.5) G21(5.5,8.5) G22(6.5,8.5) G23(7.5,8.5) G24(8.5,8.5) G25(9.5,8.5) G26(10.5,8.5) G27(11.5,8.5) G28(12.5,8.5) G29(13.5,8.5) G30(14.5,8.5) H1(-14.5,7.5) H2(-13.5,7.5) H3(-12.5,7.5) H4(-11.5,7.5) H5(-10.5,7.5) H6(-9.5,7.5) H7(-8.5,7.5) H8(-7.5,7.5) H9(-6.5,7.5) H10(-5.5,7.5) H11(-4.5,7.5) H12(-3.5,7.5) H13(-2.5,7.5) H14(-1.5,7.5) H15(-0.5,7.5) H16(0.5,7.5) H17(1.5,7.5) H18(2.5,7.5) H19(3.5,7.5) H20(4.5,7.5) H21(5.5,7.5) H22(6.5,7.5) H23(7.5,7.5) H24(8.5,7.5) H25(9.5,7.5) H26(10.5,7.5) H27(11.5,7.5) H28(12.5,7.5) H29(13.5,7.5) H30(14.5,7.5) J1(-14.5,6.5) J2(-13.5,6.5) J3(-12.5,6.5) J4(-11.5,6.5) J5(-10.5,6.5) J6(-9.5,6.5) J7(-8.5,6.5) J8(-7.5,6.5) J9(-6.5,6.5) J10(-5.5,6.5) J11(-4.5,6.5) J12(-3.5,6.5) J13(-2.5,6.5) J14(-1.5,6.5) J15(-0.5,6.5) J16(0.5,6.5) J17(1.5,6.5) J18(2.5,6.5) J19(3.5,6.5) J20(4.5,6.5) J21(5.5,6.5) J22(6.5,6.5) J23(7.5,6.5) J24(8.5,6.5) J25(9.5,6.5) J26(10.5,6.5) J27(11.5,6.5) J28(12.5,6.5) J29(13.5,6.5) J30(14.5,6.5) K1(-14.5,5.5) K2(-13.5,5.5) K3(-12.5,5.5) K4(-11.5,5.5) K5(-10.5,5.5) K6(-9.5,5.5) K7(-8.5,5.5) K8(-7.5,5.5) K9(-6.5,5.5) K10(-5.5,5.5) K11(-4.5,5.5) K12(-3.5,5.5) K13(-2.5,5.5) K14(-1.5,5.5) K15(-0.5,5.5) K16(0.5,5.5) K17(1.5,5.5) K18(2.5,5.5) K19(3.5,5.5) K20(4.5,5.5) K21(5.5,5.5) K22(6.5,5.5) K23(7.5,5.5) K24(8.5,5.5) K25(9.5,5.5) K26(10.5,5.5) K27(11.5,5.5) K28(12.5,5.5) K29(13.5,5.5) K30(14.5,5.5) L1(-14.5,4.5) L2(-13.5,4.5) L3(-12.5,4.5) L4(-11.5,4.5) L5(-10.5,4.5) L6(-9.5,4.5) L7(-8.5,4.5) L8(-7.5,4.5) L9(-6.5,4.5) L10(-5.5,4.5) L11(-4.5,4.5) L12(-3.5,4.5) L13(-2.5,4.5) L14(-1.5,4.5) L15(-0.5,4.5) L16(0.5,4.5) L17(1.5,4.5) L18(2.5,4.5) L19(3.5,4.5) L20(4.5,4.5) L21(5.5,4.5) L22(6.5,4.5) L23(7.5,4.5) L24(8.5,4.5) L25(9.5,4.5) L26(10.5,4.5) L27(11.5,4.5) L28(12.5,4.5) L29(13.5,4.5) L30(14.5,4.5) M1(-14.5,3.5) M2(-13.5,3.5) M3(-12.5,3.5) M4(-11.5,3.5) M5(-10.5,3.5) M6(-9.5,3.5) M7(-8.5,3.5) M8(-7.5,3.5) M9(-6.5,3.5) M10(-5.5,3.5) M11(-4.5,3.5) M12(-3.5,3.5) M13(-2.5,3.5) M14(-1.5,3.5) M15(-0.5,3.5) M16(0.5,3.5) M17(1.5,3.5) M18(2.5,3.5) M19(3.5,3.5) M20(4.5,3.5) M21(5.5,3.5) M22(6.5,3.5) M23(7.5,3.5) M24(8.5,3.5) M25(9.5,3.5) M26(10.5,3.5) M27(11.5,3.5) M28(12.5,3.5) M29(13.5,3.5) M30(14.5,3.5) N1(-14.5,2.5) N2(-13.5,2.5) N3(-12.5,2.5) N4(-11.5,2.5) N5(-10.5,2.5) N6(-9.5,2.5) N7(-8.5,2.5) N8(-7.5,2.5) N9(-6.5,2.5) N10(-5.5,2.5) N11(-4.5,2.5) N12(-3.5,2.5) N13(-2.5,2.5) N14(-1.5,2.5) N15(-0.5,2.5) N16(0.5,2.5) N17(1.5,2.5) N18(2.5,2.5) N19(3.5,2.5) N20(4.5,2.5) N21(5.5,2.5) N22(6.5,2.5) N23(7.5,2.5) N24(8.5,2.5) N25(9.5,2.5) N26(10.5,2.5) N27(11.5,2.5) N28(12.5,2.5) N29(13.5,2.5) N30(14.5,2.5) P1(-14.5,1.5) P2(-13.5,1.5) P3(-12.5,1.5) P4(-11.5,1.5) P5(-10.5,1.5) P6(-9.5,1.5) P7(-8.5,1.5) P8(-7.5,1.5) P9(-6.5,1.5) P10(-5.5,1.5) P11(-4.5,1.5) P12(-3.5,1.5) P13(-2.5,1.5) P14(-1.5,1.5) P15(-0.5,1.5) P16(0.5,1.5) P17(1.5,1.5) P18(2.5,1.5) P19(3.5,1.5) P20(4.5,1.5) P21(5.5,1.5) P22(6.5,1.5) P23(7.5,1.5) P24(8.5,1.5) P25(9.5,1.5) P26(10.5,1.5) P27(11.5,1.5) P28(12.5,1.5) P29(13.5,1.5) P30(14.5,1.5) R1(-14.5,0.5) R2(-13.5,0.5) R3(-12.5,0.5) R4(-11.5,0.5) R5(-10.5,0.5) R6(-9.5,0.5) R7(-8.5,0.5) R8(-7.5,0.5) R9(-6.5,0.5) R10(-5.5,0.5) R11(-4.5,0.5) R12(-3.5,0.5) R13(-2.5,0.5) R14(-1.5,0.5) R15(-0.5,0.5) R16(0.5,0.5) R17(1.5,0.5) R18(2.5,0.5) R19(3.5,0.5) R20(4.5,0.5) R21(5.5,0.5) R22(6.5,0.5) R23(7.5,0.5) R24(8.5,0.5) R25(9.5,0.5) R26(10.5,0.5) R27(11.5,0.5) R28(12.5,0.5) R29(13.5,0.5) R30(14.5,0.5) T1(-14.5,-0.5) T2(-13.5,-0.5) T3(-12.5,-0.5) T4(-11.5,-0.5) T5(-10.5,-0.5) T6(-9.5,-0.5) T7(-8.5,-0.5) T8(-7.5,-0.5) T9(-6.5,-0.5) T10(-5.5,-0.5) T11(-4.5,-0.5) T12(-3.5,-0.5) T13(-2.5,-0.5) T14(-1.5,-0.5) T15(-0.5,-0.5) T16(0.5,-0.5) T17(1.5,-0.5) T18(2.5,-0.5) T19(3.5,-0.5) T20(4.5,-0.5) T21(5.5,-0.5) T22(6.5,-0.5) T23(7.5,-0.5) T24(8.5,-0.5) T25(9.5,-0.5) T26(10.5,-0.5) T27(11.5,-0.5) T28(12.5,-0.5) T29(13.5,-0.5) T30(14.5,-0.5) U1(-14.5,-1.5) U2(-13.5,-1.5) U3(-12.5,-1.5) U4(-11.5,-1.5) U5(-10.5,-1.5) U6(-9.5,-1.5) U7(-8.5,-1.5) U8(-7.5,-1.5) U9(-6.5,-1.5) U10(-5.5,-1.5) U11(-4.5,-1.5) U12(-3.5,-1.5) U13(-2.5,-1.5) U14(-1.5,-1.5) U15(-0.5,-1.5) U16(0.5,-1.5) U17(1.5,-1.5) U18(2.5,-1.5) U19(3.5,-1.5) U20(4.5,-1.5) U21(5.5,-1.5) U22(6.5,-1.5) U23(7.5,-1.5) U24(8.5,-1.5) U25(9.5,-1.5) U26(10.5,-1.5) U27(11.5,-1.5) U28(12.5,-1.5) U29(13.5,-1.5) U30(14.5,-1.5) V1(-14.5,-2.5) V2(-13.5,-2.5) V3(-12.5,-2.5) V4(-11.5,-2.5) V5(-10.5,-2.5) V6(-9.5,-2.5) V7(-8.5,-2.5) V8(-7.5,-2.5) V9(-6.5,-2.5) V10(-5.5,-2.5) V11(-4.5,-2.5) V12(-3.5,-2.5) V13(-2.5,-2.5) V14(-1.5,-2.5) V15(-0.5,-2.5) V16(0.5,-2.5) V17(1.5,-2.5) V18(2.5,-2.5) V19(3.5,-2.5) V20(4.5,-2.5) V21(5.5,-2.5) V22(6.5,-2.5) V23(7.5,-2.5) V24(8.5,-2.5) V25(9.5,-2.5) V26(10.5,-2.5) V27(11.5,-2.5) V28(12.5,-2.5) V29(13.5,-2.5) V30(14.5,-2.5) W1(-14.5,-3.5) W2(-13.5,-3.5) W3(-12.5,-3.5) W4(-11.5,-3.5) W5(-10.5,-3.5) W6(-9.5,-3.5) W7(-8.5,-3.5) W8(-7.5,-3.5) W9(-6.5,-3.5) W10(-5.5,-3.5) W11(-4.5,-3.5) W12(-3.5,-3.5) W13(-2.5,-3.5) W14(-1.5,-3.5) W15(-0.5,-3.5) W16(0.5,-3.5) W17(1.5,-3.5) W18(2.5,-3.5) W19(3.5,-3.5) W20(4.5,-3.5) W21(5.5,-3.5) W22(6.5,-3.5) W23(7.5,-3.5) W24(8.5,-3.5) W25(9.5,-3.5) W26(10.5,-3.5) W27(11.5,-3.5) W28(12.5,-3.5) W29(13.5,-3.5) W30(14.5,-3.5) Y1(-14.5,-4.5) Y2(-13.5,-4.5) Y3(-12.5,-4.5) Y4(-11.5,-4.5) Y5(-10.5,-4.5) Y6(-9.5,-4.5) Y7(-8.5,-4.5) Y8(-7.5,-4.5) Y9(-6.5,-4.5) Y10(-5.5,-4.5) Y11(-4.5,-4.5) Y12(-3.5,-4.5) Y13(-2.5,-4.5) Y14(-1.5,-4.5) Y15(-0.5,-4.5) Y16(0.5,-4.5) Y17(1.5,-4.5) Y18(2.5,-4.5) Y19(3.5,-4.5) Y20(4.5,-4.5) Y21(5.5,-4.5) Y22(6.5,-4.5) Y23(7.5,-4.5) Y24(8.5,-4.5) Y25(9.5,-4.5) Y26(10.5,-4.5) Y27(11.5,-4.5) Y28(12.5,-4.5) Y29(13.5,-4.5) Y30(14.5,-4.5)
  silkscreen extent -17,-15.5 15.5,17
MC_S6/SM/ADC_DB20 [mm]
  rrect50% 1.45x0.4 smd: 1(-3.375,2.925) 2(-3.375,2.275) 3(-3.375,1.625) 4(-3.375,0.975) 5(-3.375,0.325) 6(-3.375,-0.325) 7(-3.375,-0.975) 8(-3.375,-1.625) 9(-3.375,-2.275) 10(-3.375,-2.925) 11(3.375,-2.925) 12(3.375,-2.275) 13(3.375,-1.625) 14(3.375,-0.975) 15(3.375,-0.325) 16(3.375,0.325) 17(3.375,0.975) 18(3.375,1.625) 19(3.375,2.275) 20(3.375,2.925)
  Top Layer pour cut-out: -4.3,3.4 -4.3,-3.4 -2.4,-3.4 -2.4,3.4
  Top Layer pour cut-out: 2.4,3.4 2.4,-3.4 4.3,-3.4 4.3,3.4
  silkscreen extent -3.6,-3.67 2.22,3.95, body extent -3.17,-3.32 3.23,3.28, height 1.2
MC_S6/SM/C_0402_IPC [mm]
  rrect25% 0.6x0.7 smd: 1(-0.5,0) 2(0.5,0)
  silkscreen extent -1.1,-0.6 1.1,0.6, body extent -0.57,-0.27 0.48,0.28, height 0.55
MC_S6/SM/C_0603_IPC [mm]
  rrect25% 1x1 smd: 1(-0.8,0) 2(0.8,0)
  Top Layer pour cut-out: -1.6,-0.8 1.6,-0.8 1.6,0.8 -1.6,0.8
  silkscreen extent -1.5,-0.75 1.5,0.75, body extent -0.87,-0.47 0.88,0.48, height 0.55
MC_S6/SM/C_0805_IPC [mm]
  rrect25% 1.3x1.5 smd: 1(-0.95,0) 2(0.95,0)
  Top Layer pour cut-out: -2,-1.1 2,-1.1 2,1.1 -2,1.1
  silkscreen extent -1.95,-1.1 1.95,1.1, body extent -1.1,-0.67 1.1,0.68, height 1.35
MC_S6/SM/C_1210_IPC [mm]
  rrect25% 1.6x2.7 smd: 1(-1.4,0) 2(1.4,0)
  Top Layer pour cut-out: -2.5,-1.7 2.5,-1.7 2.5,1.7 -2.5,1.7
  silkscreen extent -2.5,-1.7 2.5,1.7, body extent -1.7,-1.35 1.7,1.35, height 2.7
MC_S6/SM/CT_2917_D [mm]
  rrect25% 2.45x2.4 smd: 1(-2.3,0)
  rrect25% 3.35x2.4 smd: 2(2.6,0)
  Top Layer pour cut-out: -4.7,-1.6 4.7,-1.6 4.7,1.6 -4.7,1.6
  Top Layer region: -4.1,1.2 -4.4,0.9 -4.4,-0.9 -4.1,-1.2 -1.4,-1.2 -1.4,1.2
  silkscreen extent -5.15,-2.2 4.8,2.2, body extent -3.8,-2.3 3.8,2.3, height 3.11
MC_S6/SM/FIDUCIAL_DOT [mm]
  round 1 smd paste-2 mask+0.25: 1(0,0)
MC_S6/SM/LED_0603 [mm]
  rrect40% 0.8x0.9 smd: A(0.75,0)
  rrect50% 0.8x0.9 smd: K(-0.7,0)
  Top Layer pour cut-out: 1.5,0.7 -1.2,0.7 -1.5,0.4 -1.5,-0.7 1.5,-0.7
  Top Layer region: -0.3,-0.5 -0.3,0.5 -1.1,0.5 -1.3,0.3 -1.3,-0.5
  silkscreen extent -1.5,-0.7 1.45,0.7, body extent -0.88,-0.48 0.87,0.47, height 0.55
MC_S6/SM/LT1634_SOIC8 [mil]
  rrect50% 45x30 smd: 1(-102.5,75) 4(-102.5,-75) 5(102.5,-75) 8(102.5,75)
  rrect25% 45x30 smd: 2(-102.5,25) 3(-102.5,-25) 6(102.5,-25) 7(102.5,25)
  Top Layer pour cut-out: -66.93,-102.36 -66.93,102.36 -137.8,102.36 -137.8,-102.36
  Top Layer pour cut-out: 137.8,-102.36 137.8,102.36 66.93,102.36 66.93,-102.36
  silkscreen extent -111,-95 52,122, body extent -118,-98 118,98, height 69
MC_S6/SM/R_0402_IPC [mm]
  rrect25% 0.6x0.7 smd: 1(-0.5,0) 2(0.5,0)
  Top Layer pour cut-out: -1.1,0.6 -1.1,-0.6 1.1,-0.6 1.1,0.6
  silkscreen extent -1.1,-0.6 1.1,0.6, body extent -0.5,-0.25 0.5,0.25, height 0.3
MC_S6/SM/R_0603_IPC [mm]
  rect 1.1x1 smd: 1(-0.85,0) 2(0.85,0)
  Top Layer pour cut-out: -1.7,-0.8 1.7,-0.8 1.7,0.8 -1.7,0.8
  silkscreen extent -1.65,-0.76 1.65,0.76, body extent -0.87,-0.47 0.88,0.48, height 0.55
MC_S6/SM/R_0805_IPC [mm]
  rect 1.3x1.5 smd: 1(-0.95,0) 2(0.95,0)
  Top Layer pour cut-out: -1.9,-1.1 1.9,-1.1 1.9,1.1 -1.9,1.1
  silkscreen extent -1.95,-1.1 1.95,1.1, body extent -1.1,-0.67 1.1,0.68, height 0.6
MC_S6/SM/SOT23_RJ5 [mm]
  rect 1x0.55 smd: 1(-1.3,0.95) 2(-1.3,0) 3(-1.3,-0.95) 4(1.3,-0.95) 5(1.3,0.95)
  Top Layer pour cut-out: 2.1,-0.45 0.5,-0.45 0.5,-1.55 2.1,-1.55
  Top Layer pour cut-out: 2.1,1.55 0.5,1.55 0.5,0.45 2.1,0.45
  Top Layer pour cut-out: -0.5,1.55 -2.1,1.55 -2.1,-1.55 -0.5,-1.55
  silkscreen extent -1.49,-1.5 0.5,1.84
MC_S6/SM/SOT223_1243 [mm]
  rect 2.2x3.4 smd: 1(3.1,0)
  rect 2.2x1.2 smd: 2(-3.1,2.3) 3(-3.1,-2.3) 4(-3.1,0)
  Top Layer pour cut-out: 4.6,2 1.7,2 1.7,-2 4.6,-2
  Top Layer pour cut-out: -1.6,3.3 -4.5,3.3 -4.5,-3.3 -1.6,-3.3
  silkscreen extent -1.6,-3.15 1.6,3.15, body extent -3.52,-3.25 3.42,3.25, height 1.84